# Altium PCB System Control.PcbDoc (part 1 of 7)
Units mil, origin at the board's own origin, x right, y up, seen from the top; angles counter-clockwise.
Board outline 5312.56 x 5103.22 mil, 12 copper layers (Top, GND 2, Signal 3, Signal 4, 3.3V 5, Signal 6, Signal 7, 2.5V 8, Signal 9, Signal 10, GND 11, Bottom); 503 components, 484 nets, 2219 pads, 1158 vias.
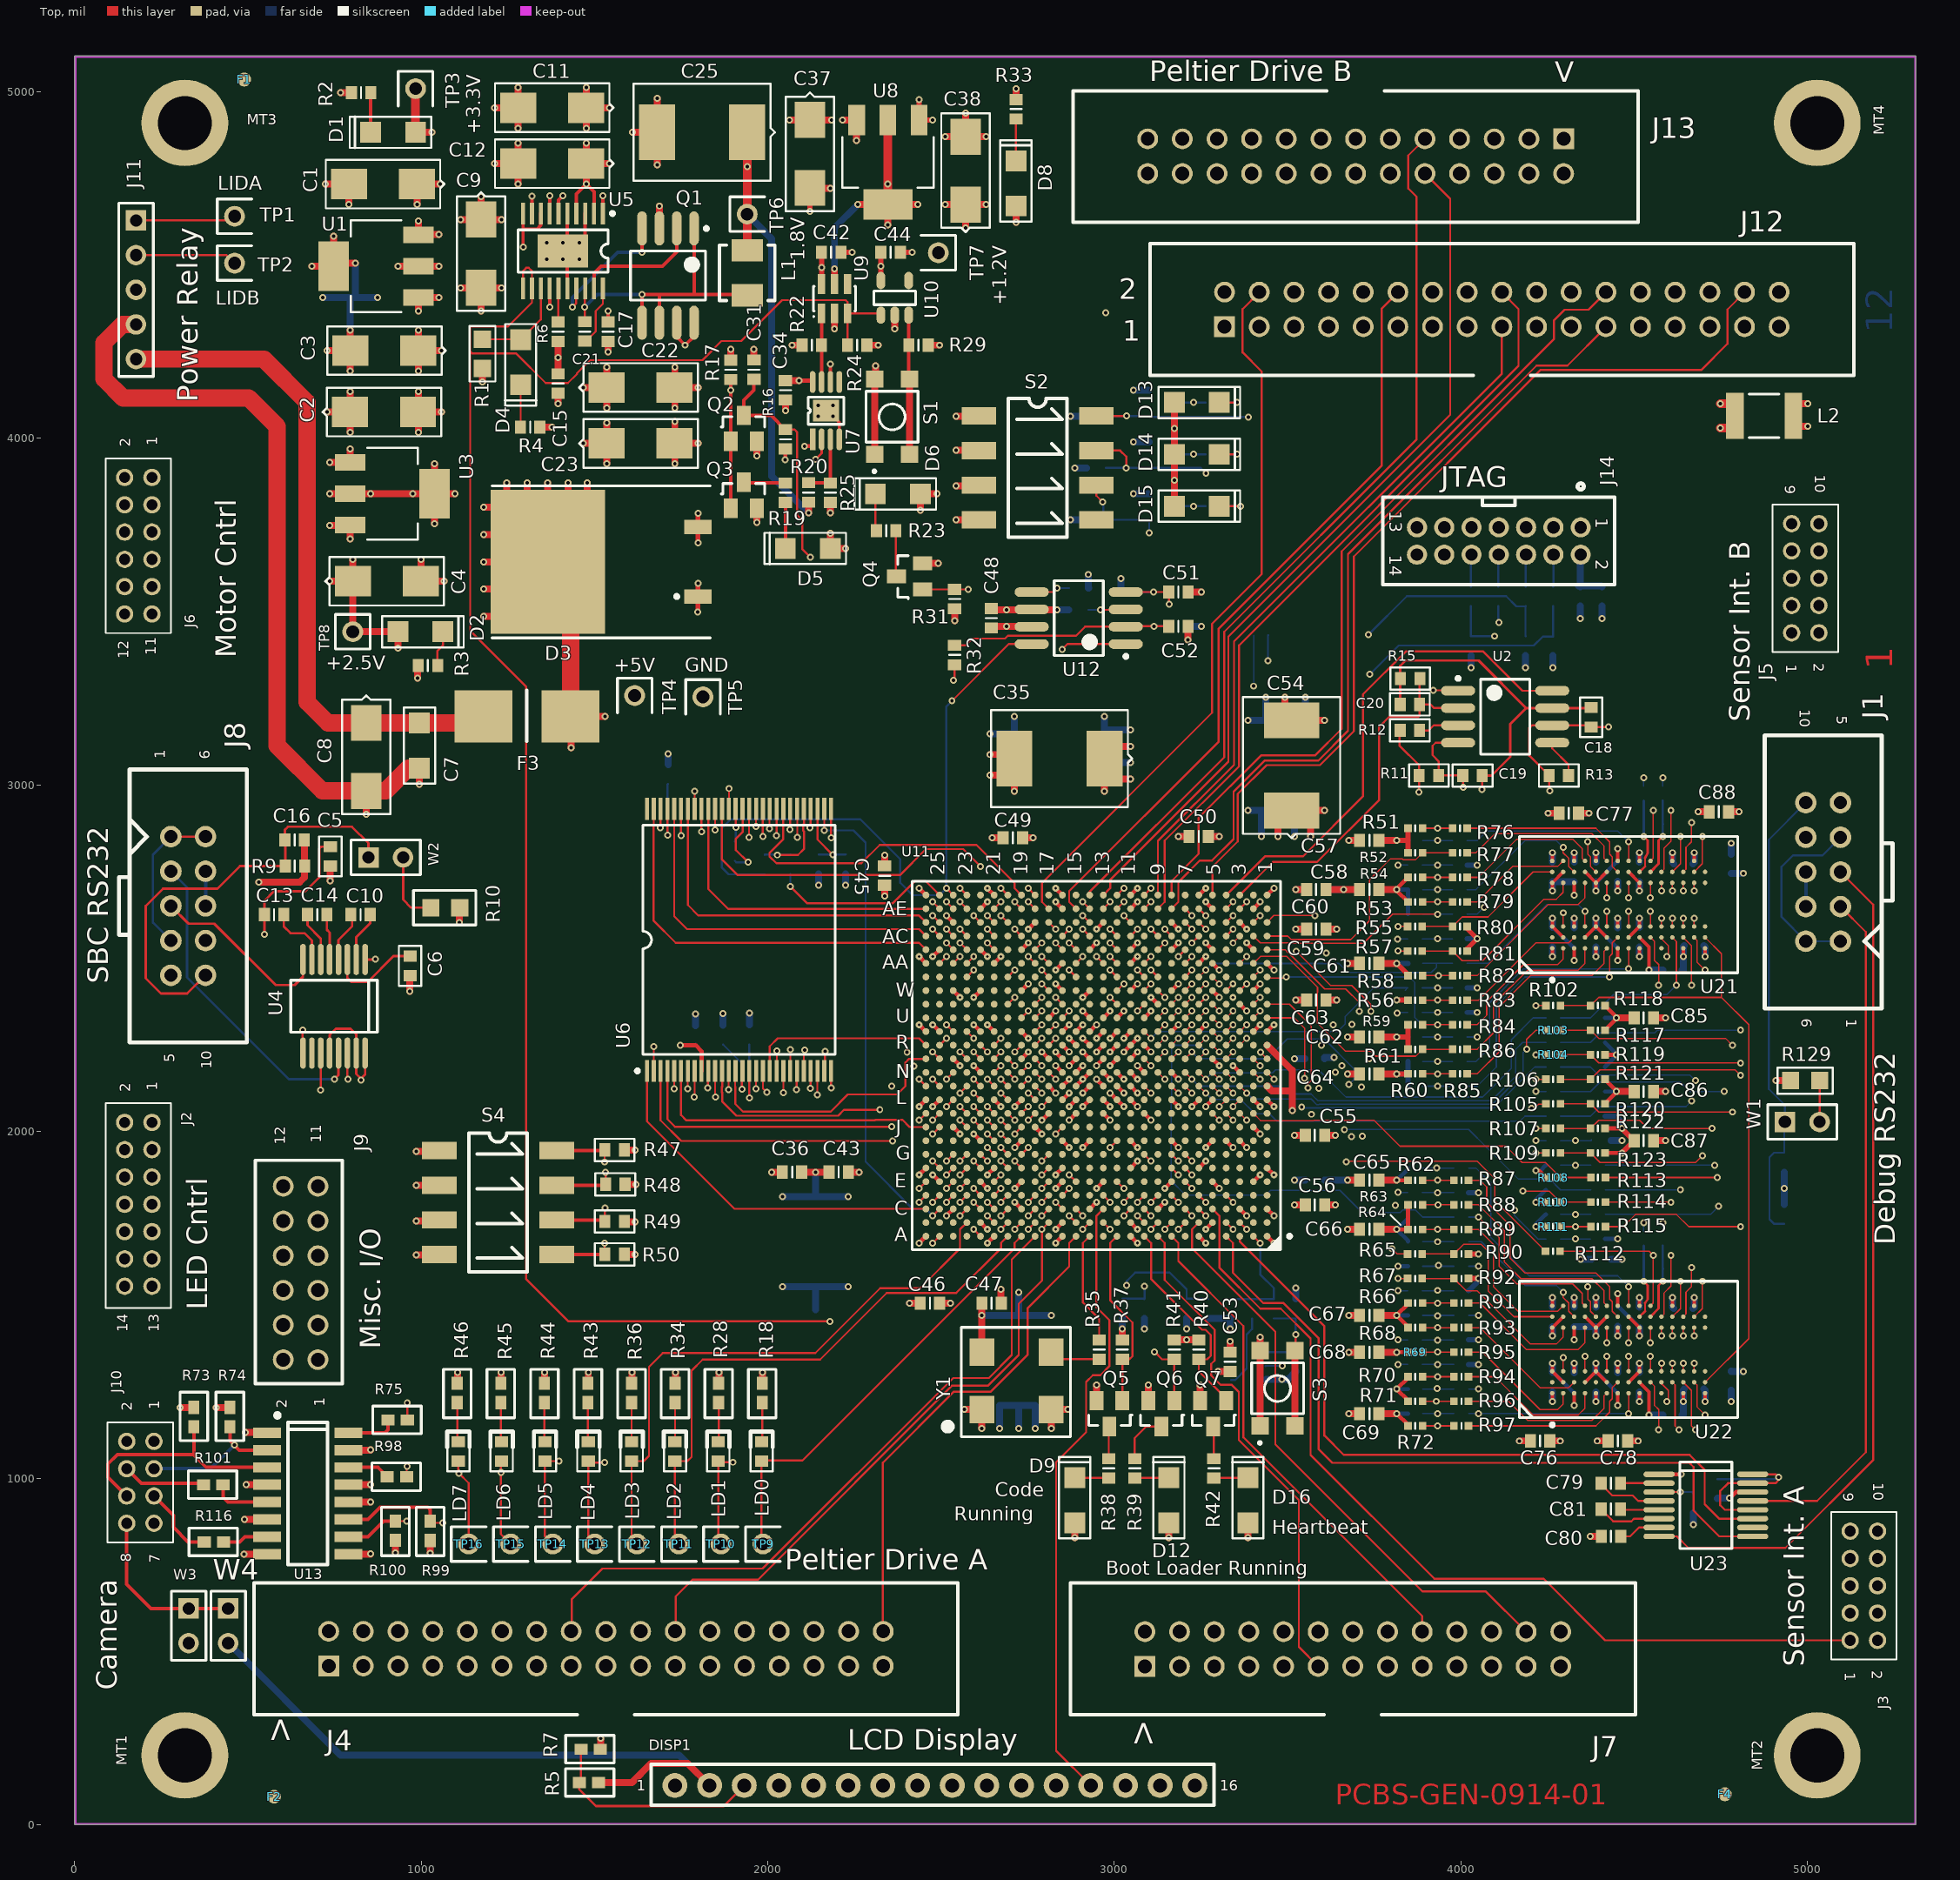
[diagram p0: Top view]
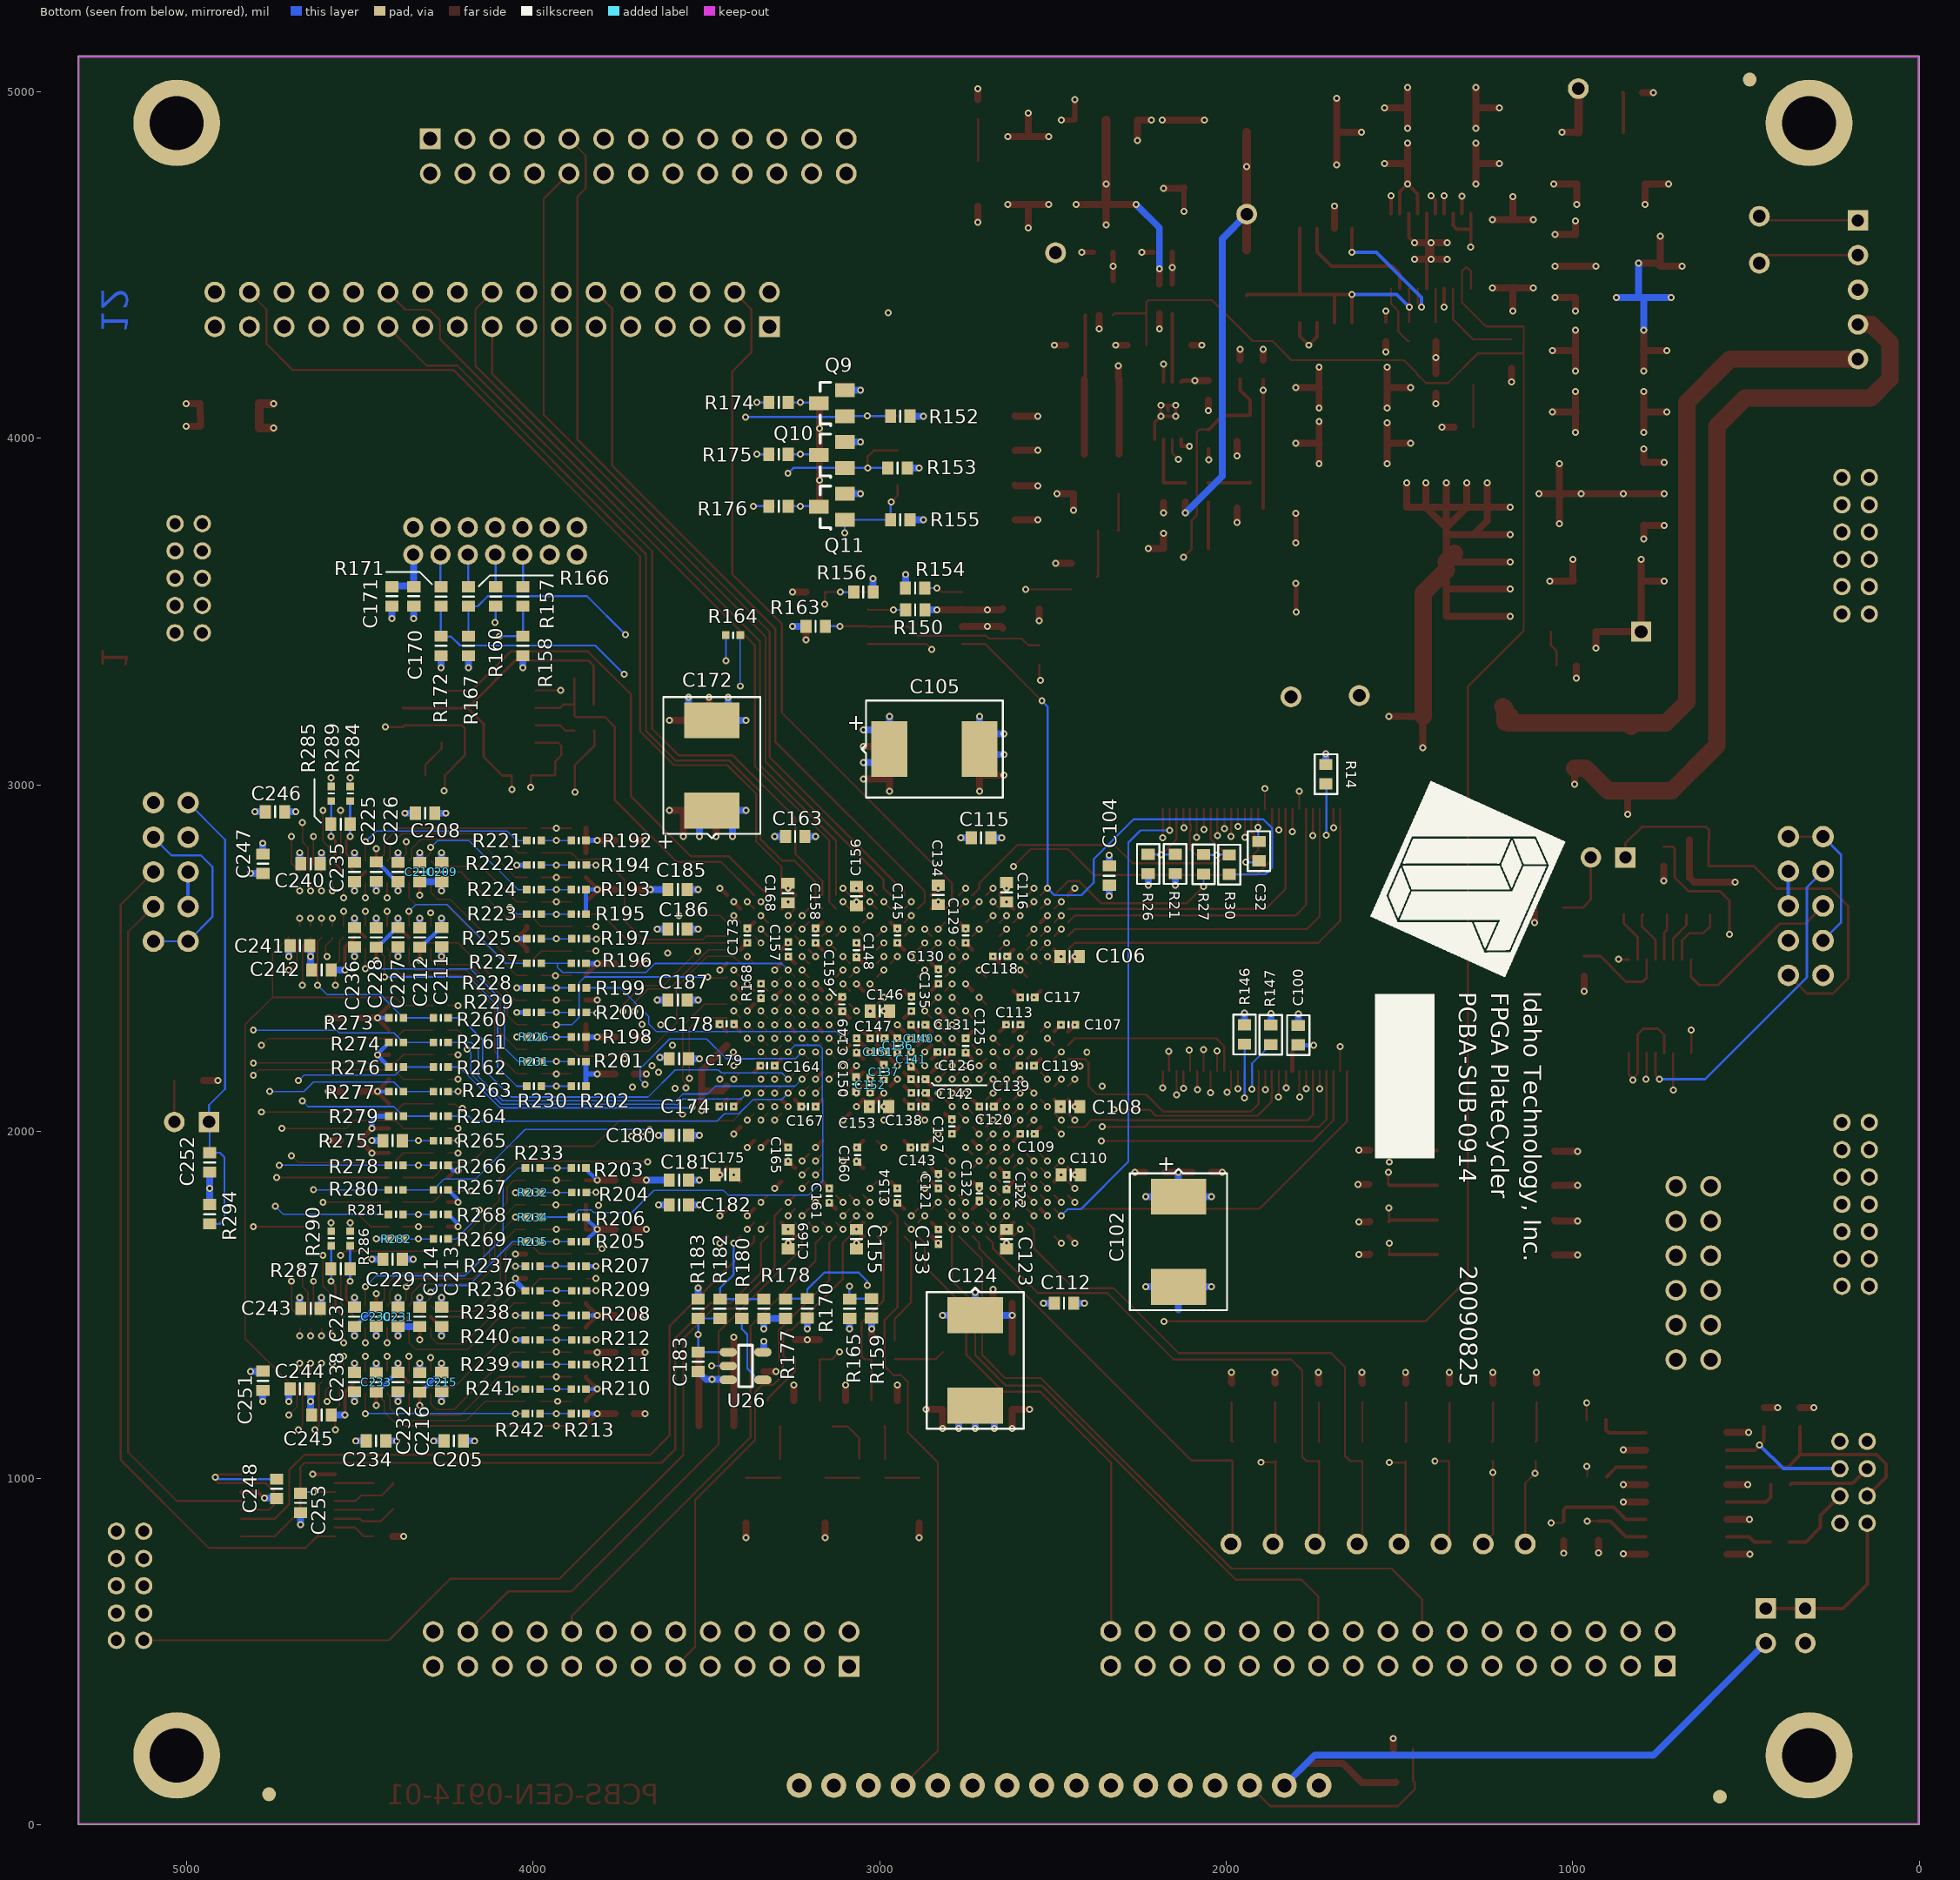
[diagram p1: Bottom view, seen from below]
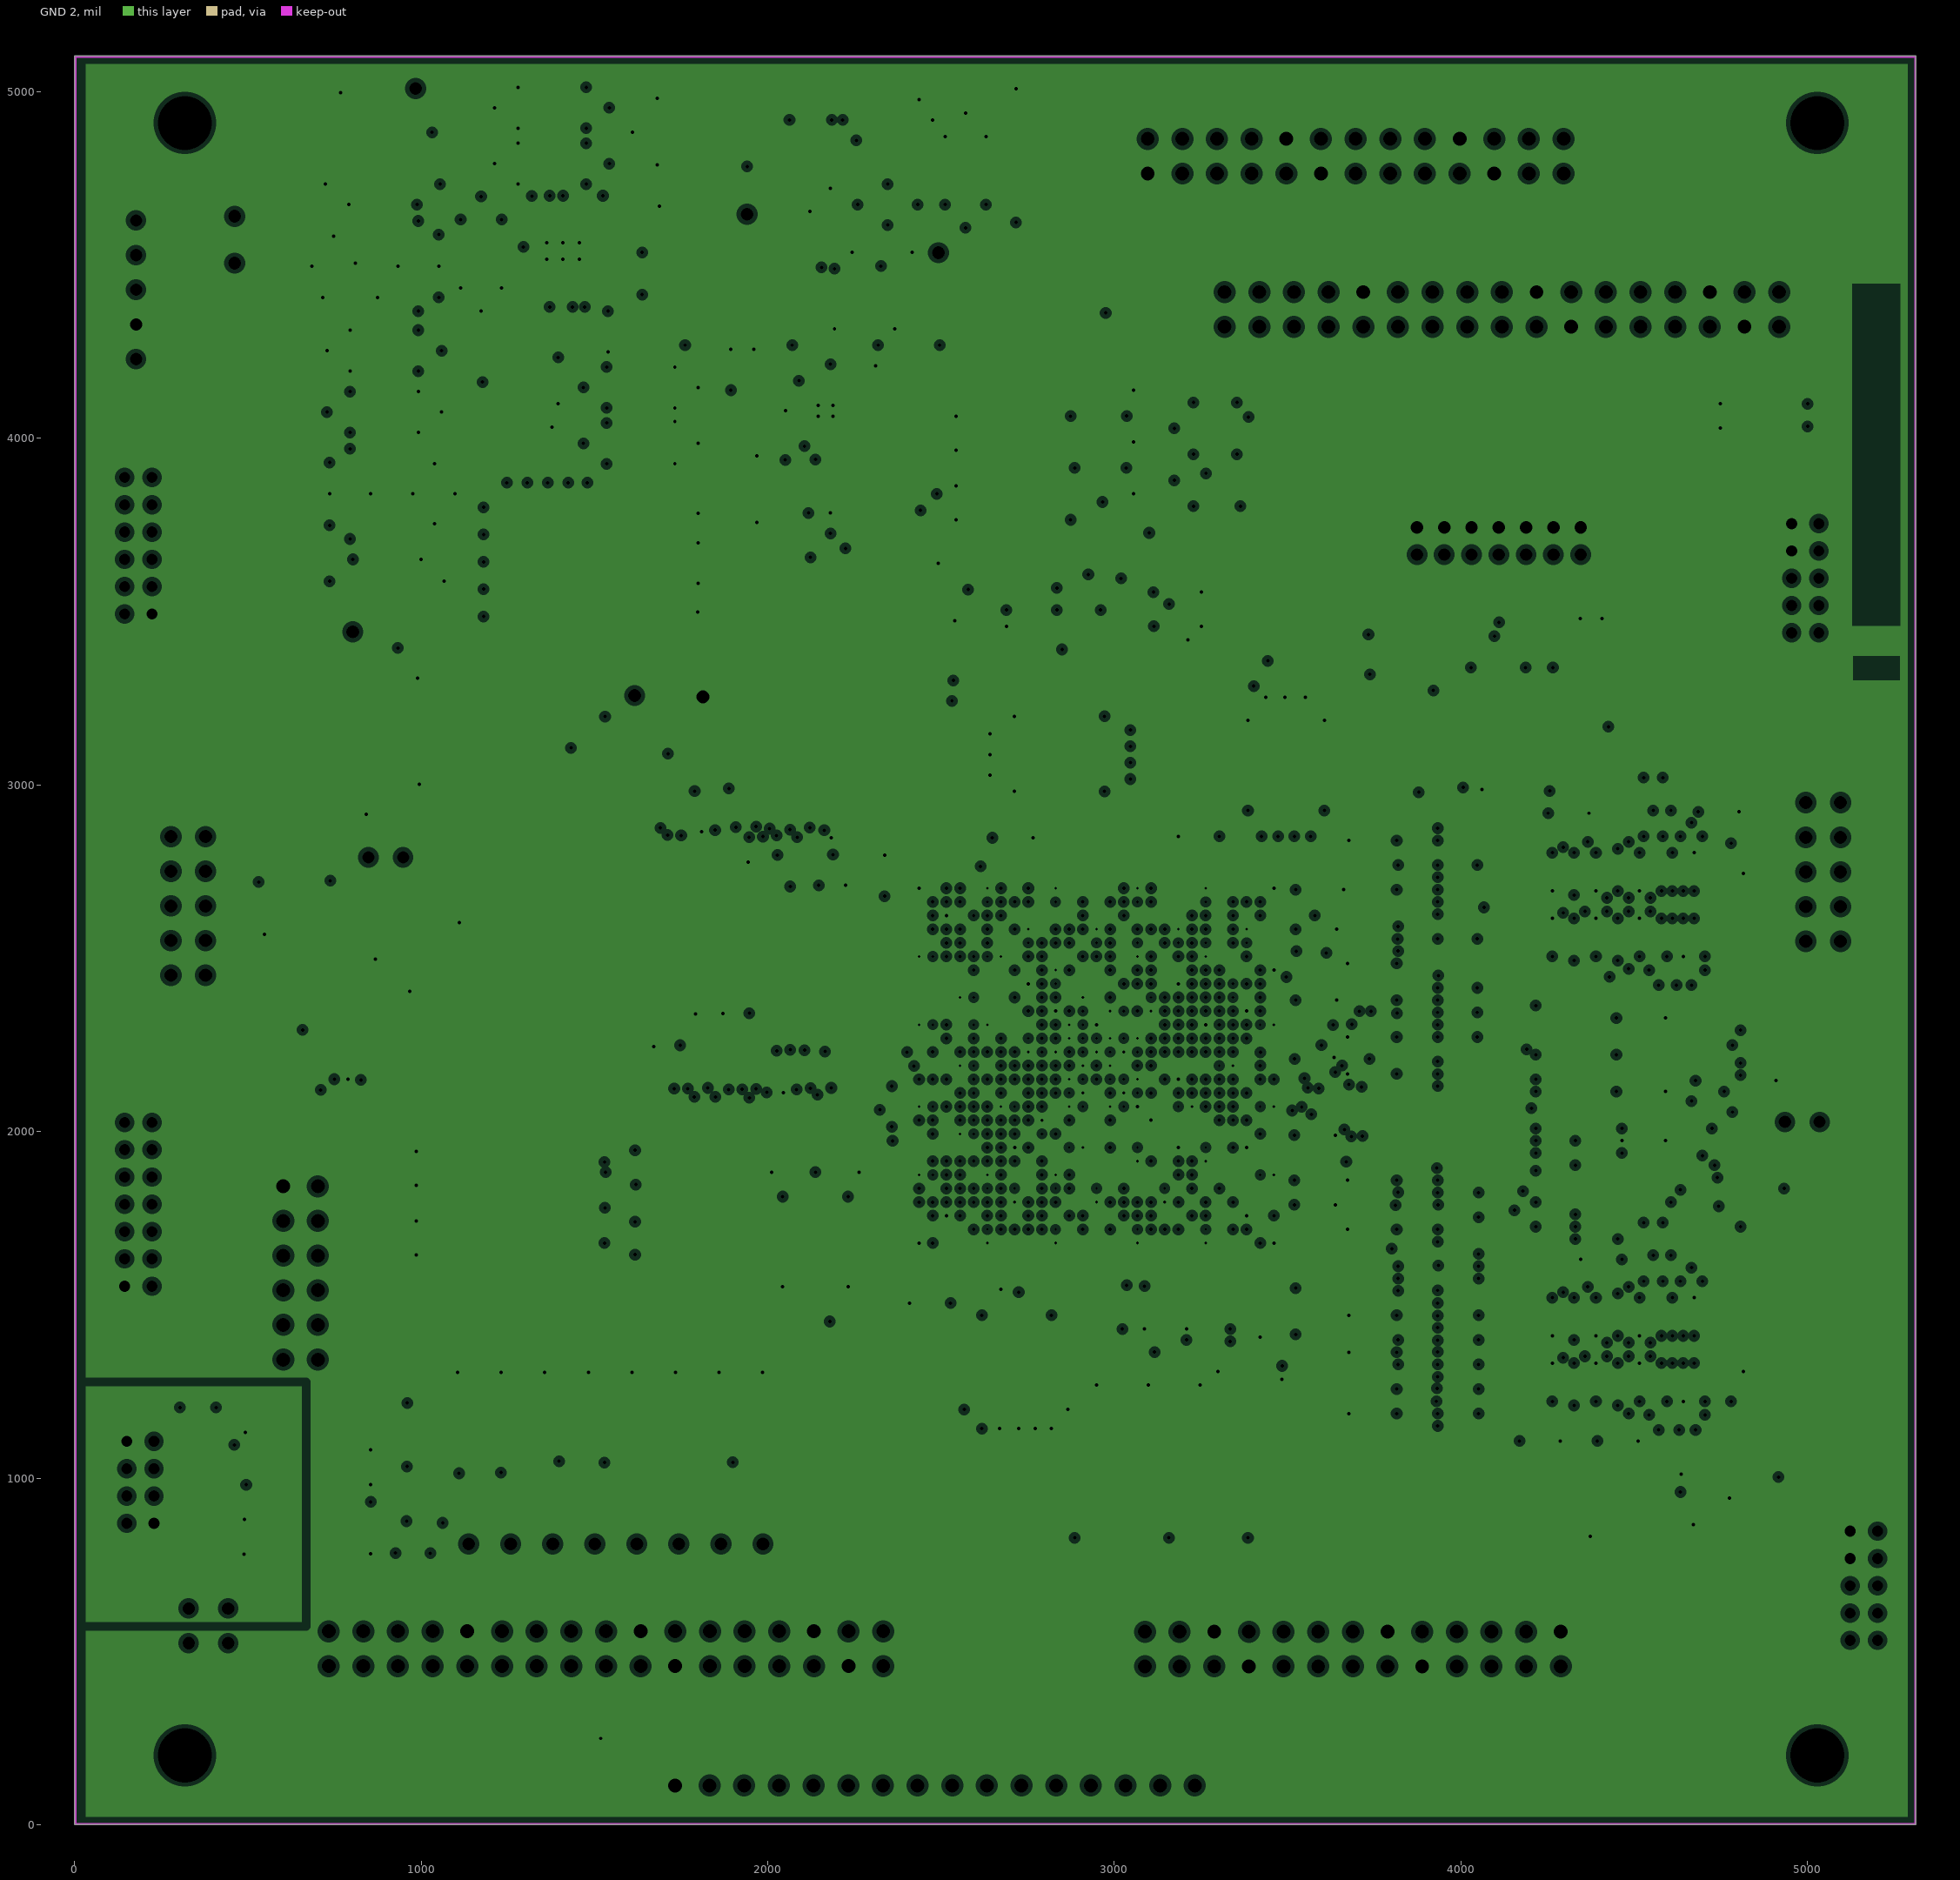
[diagram p2: GND 2, clearances drawn from the general rule]
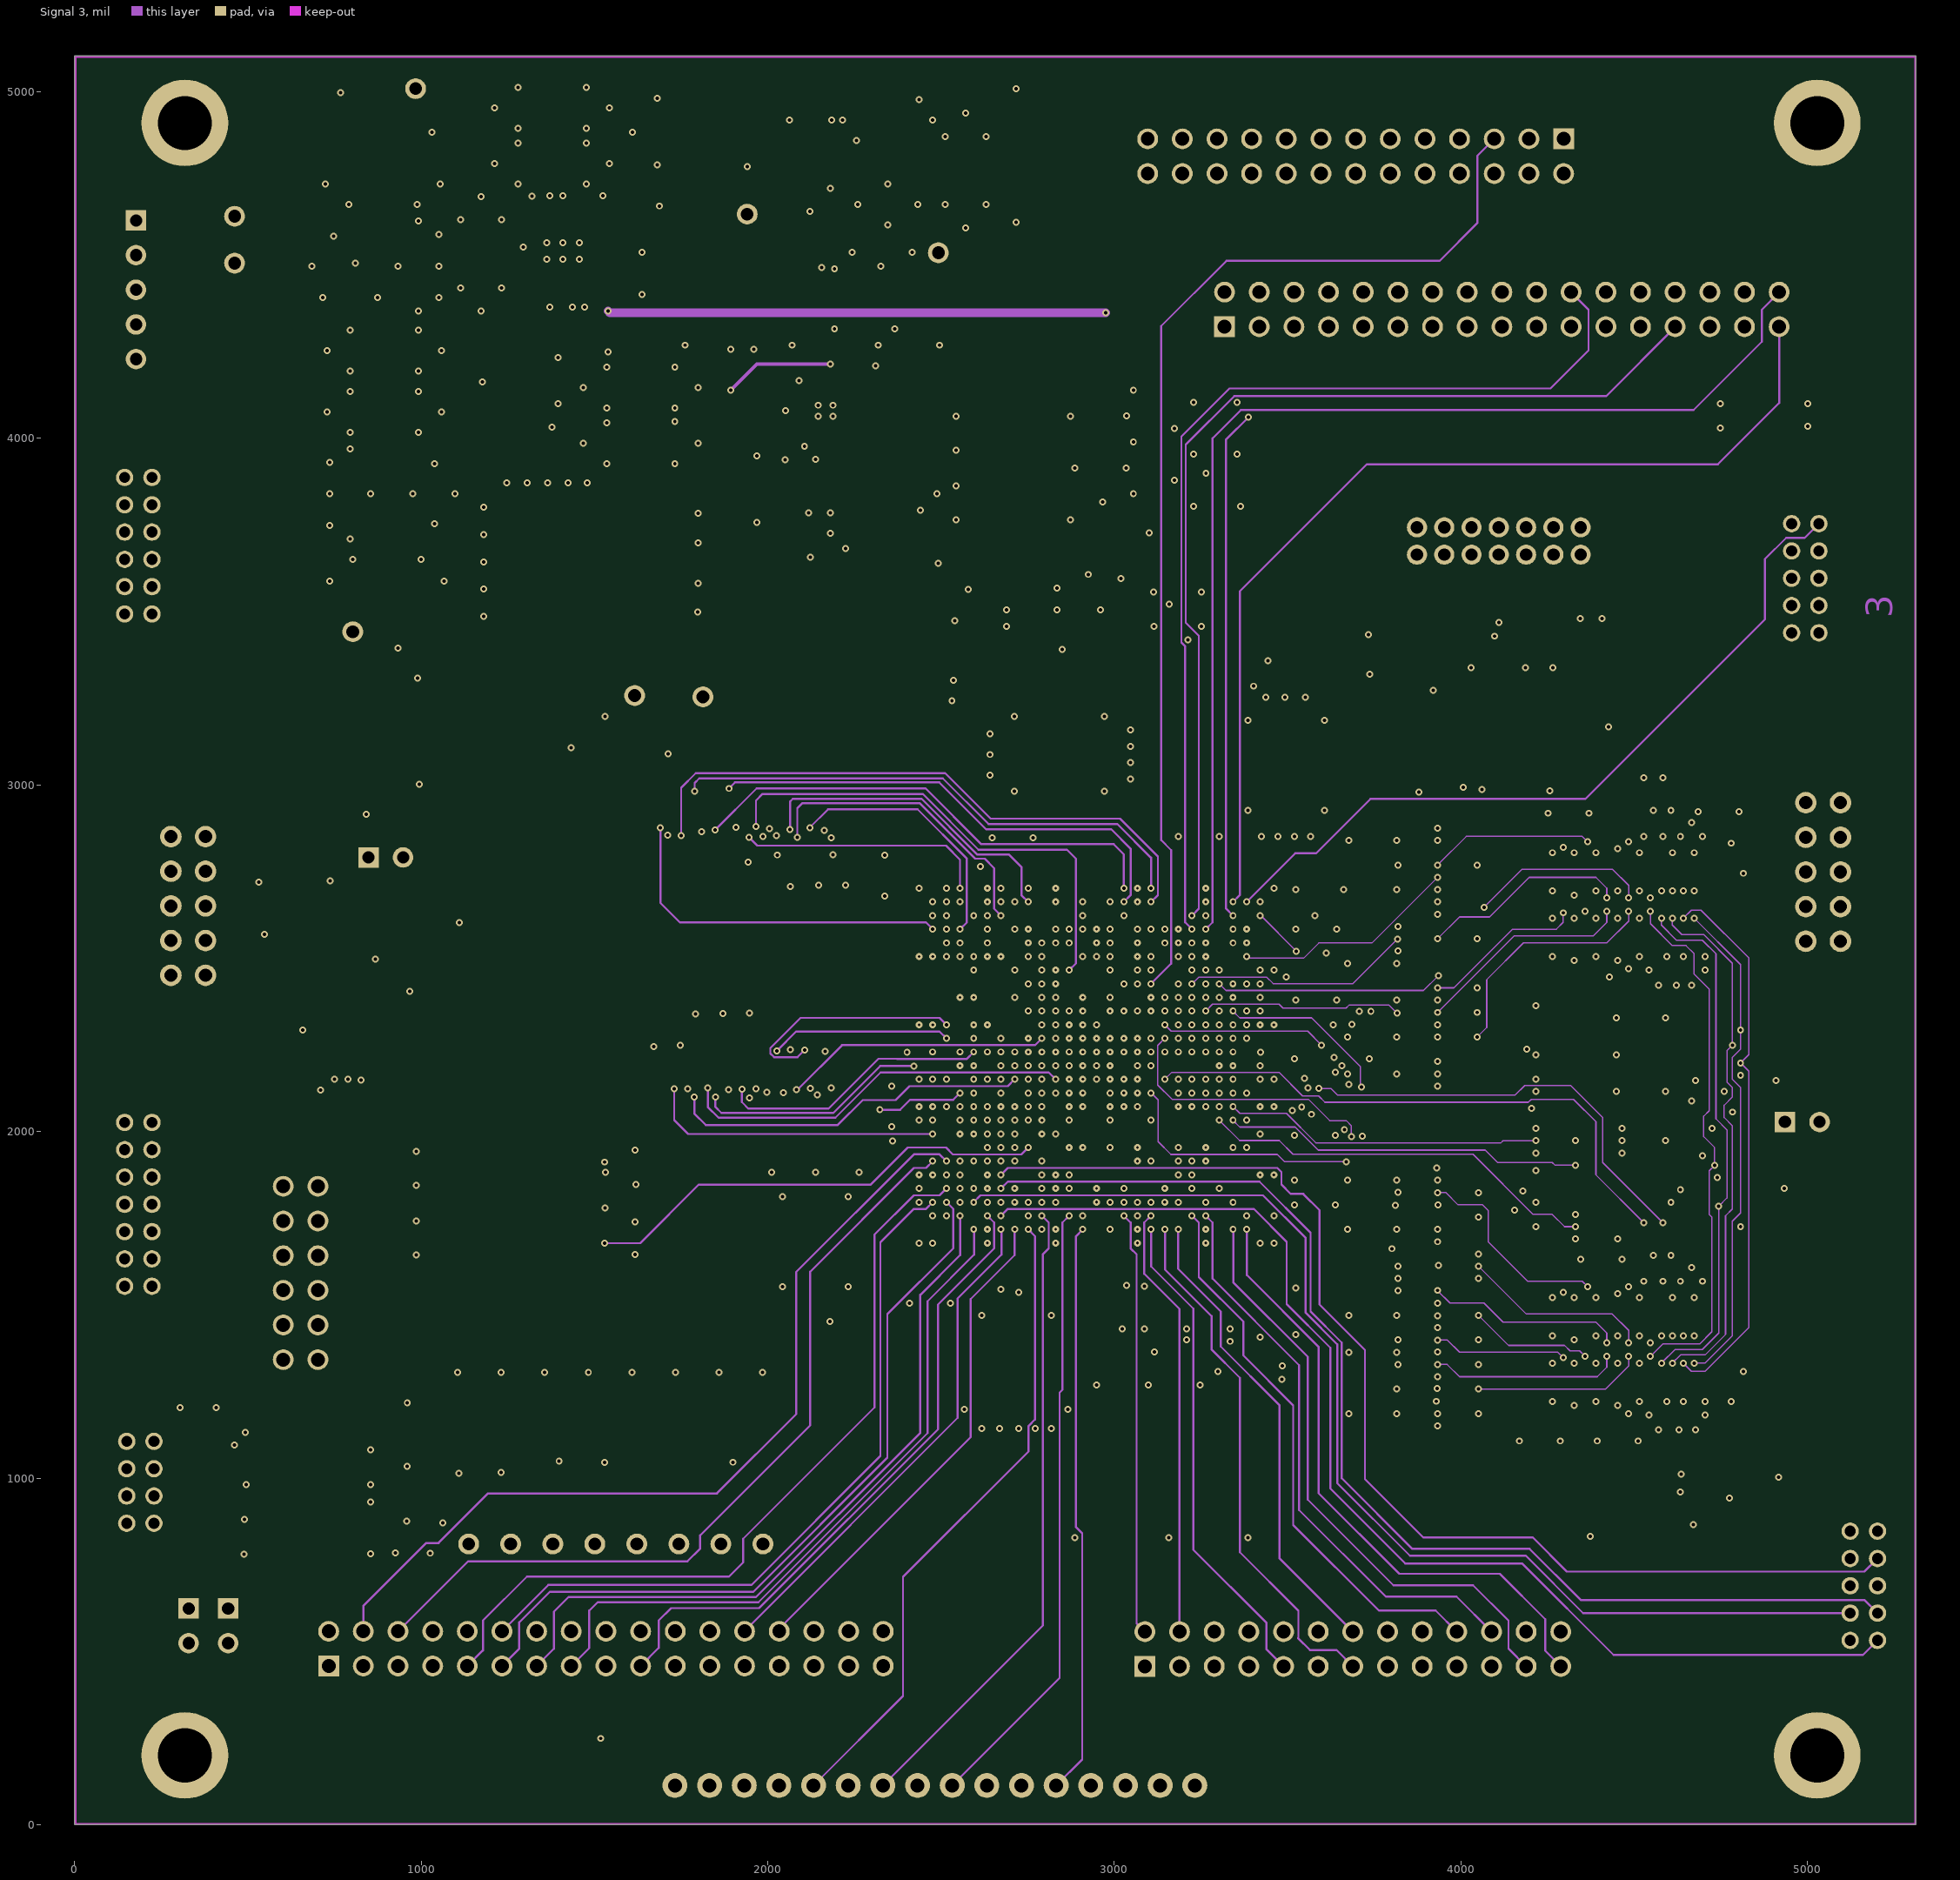
[diagram p3: Signal 3]
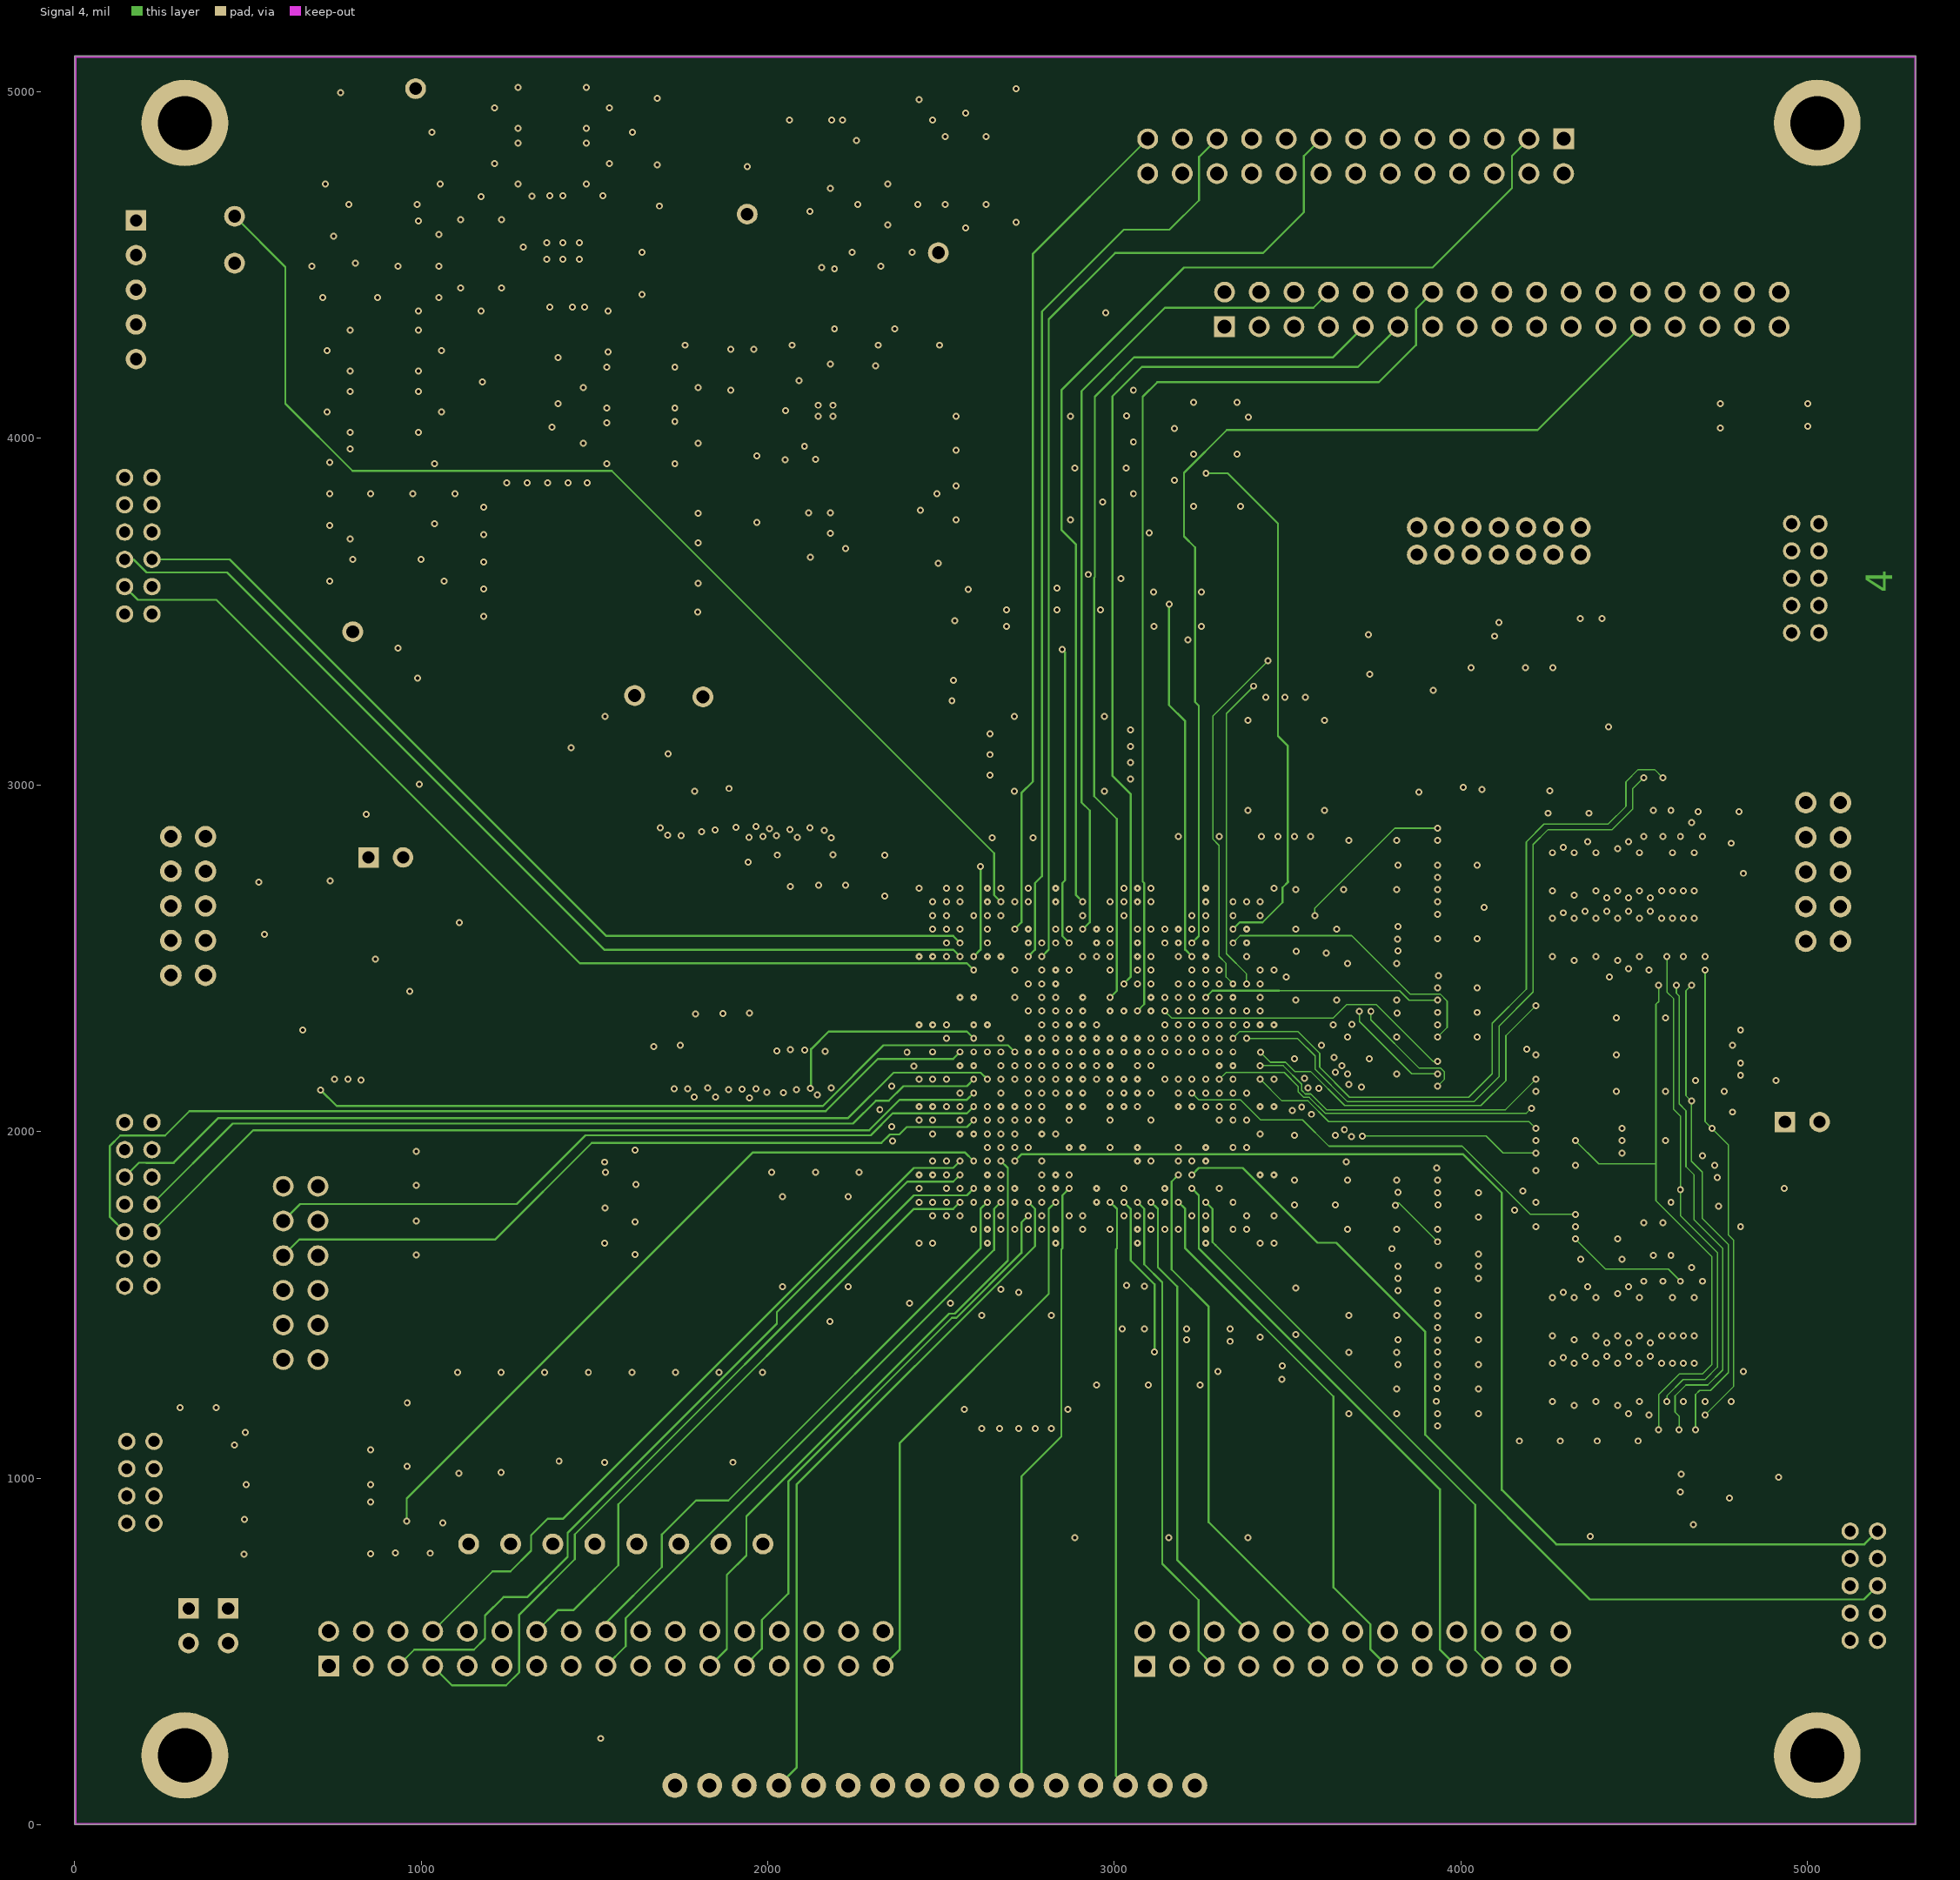
[diagram p4: Signal 4]
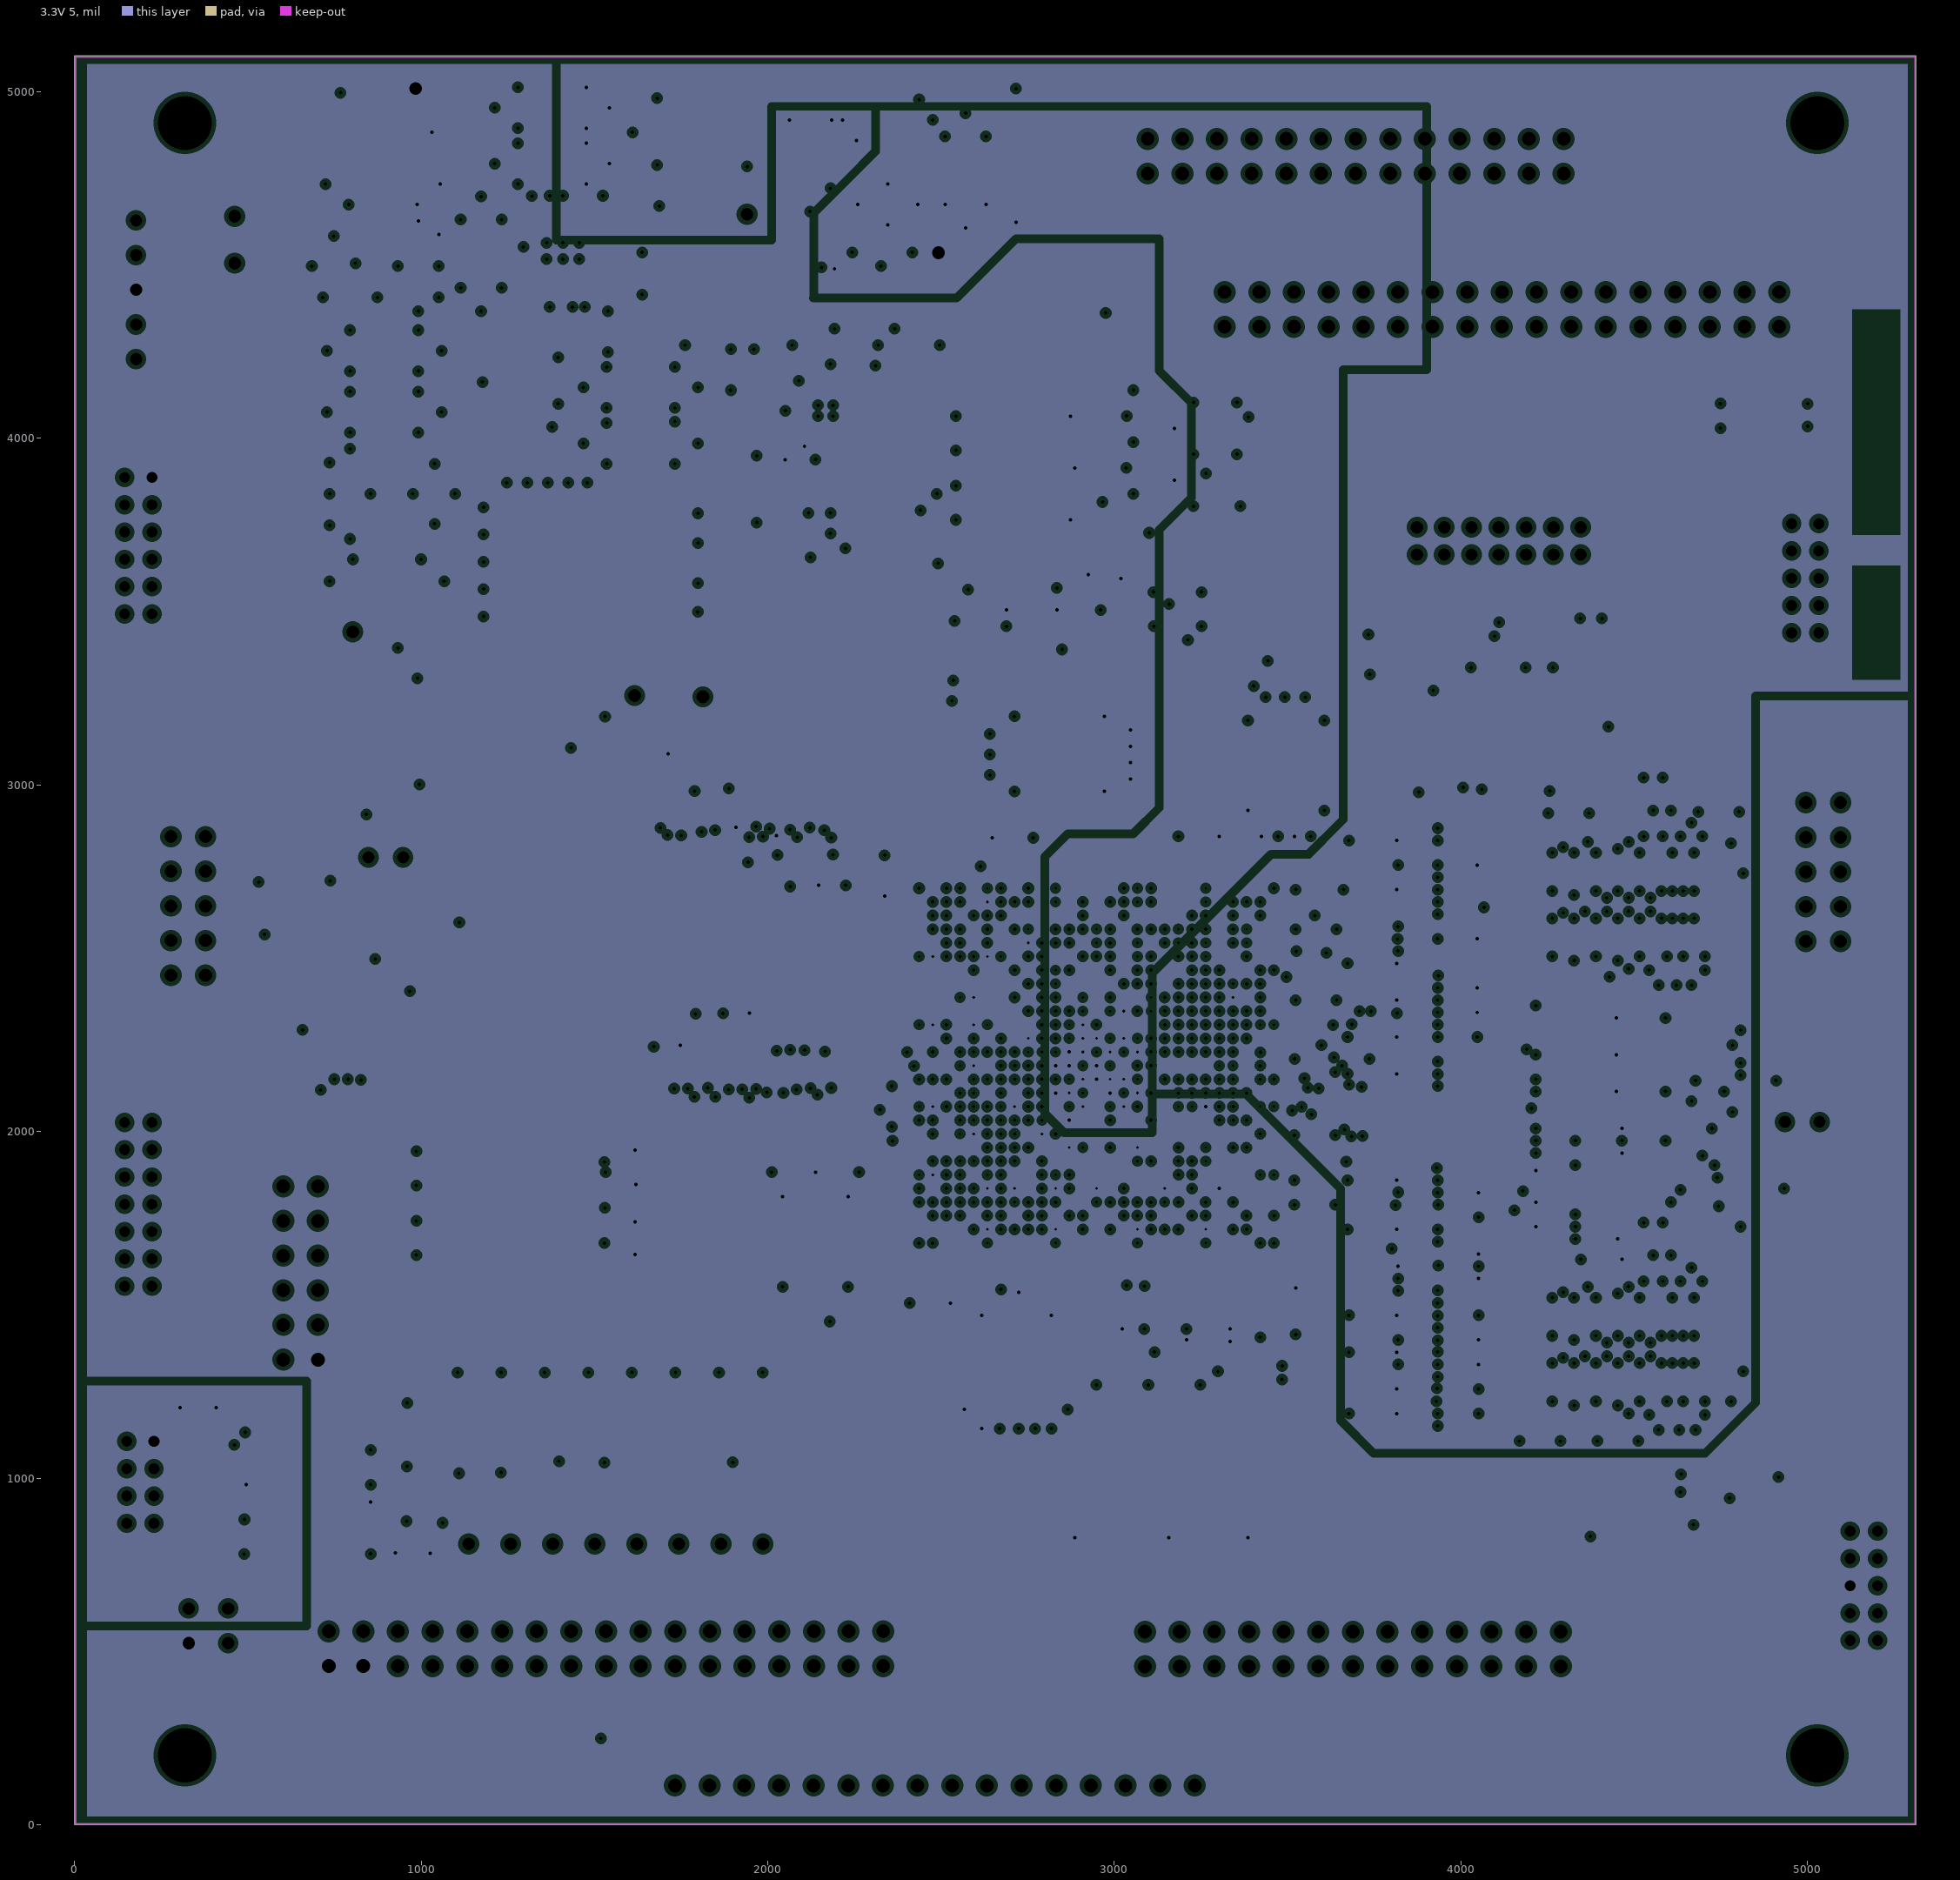
[diagram p5: 3.3V 5, clearances drawn from the general rule]
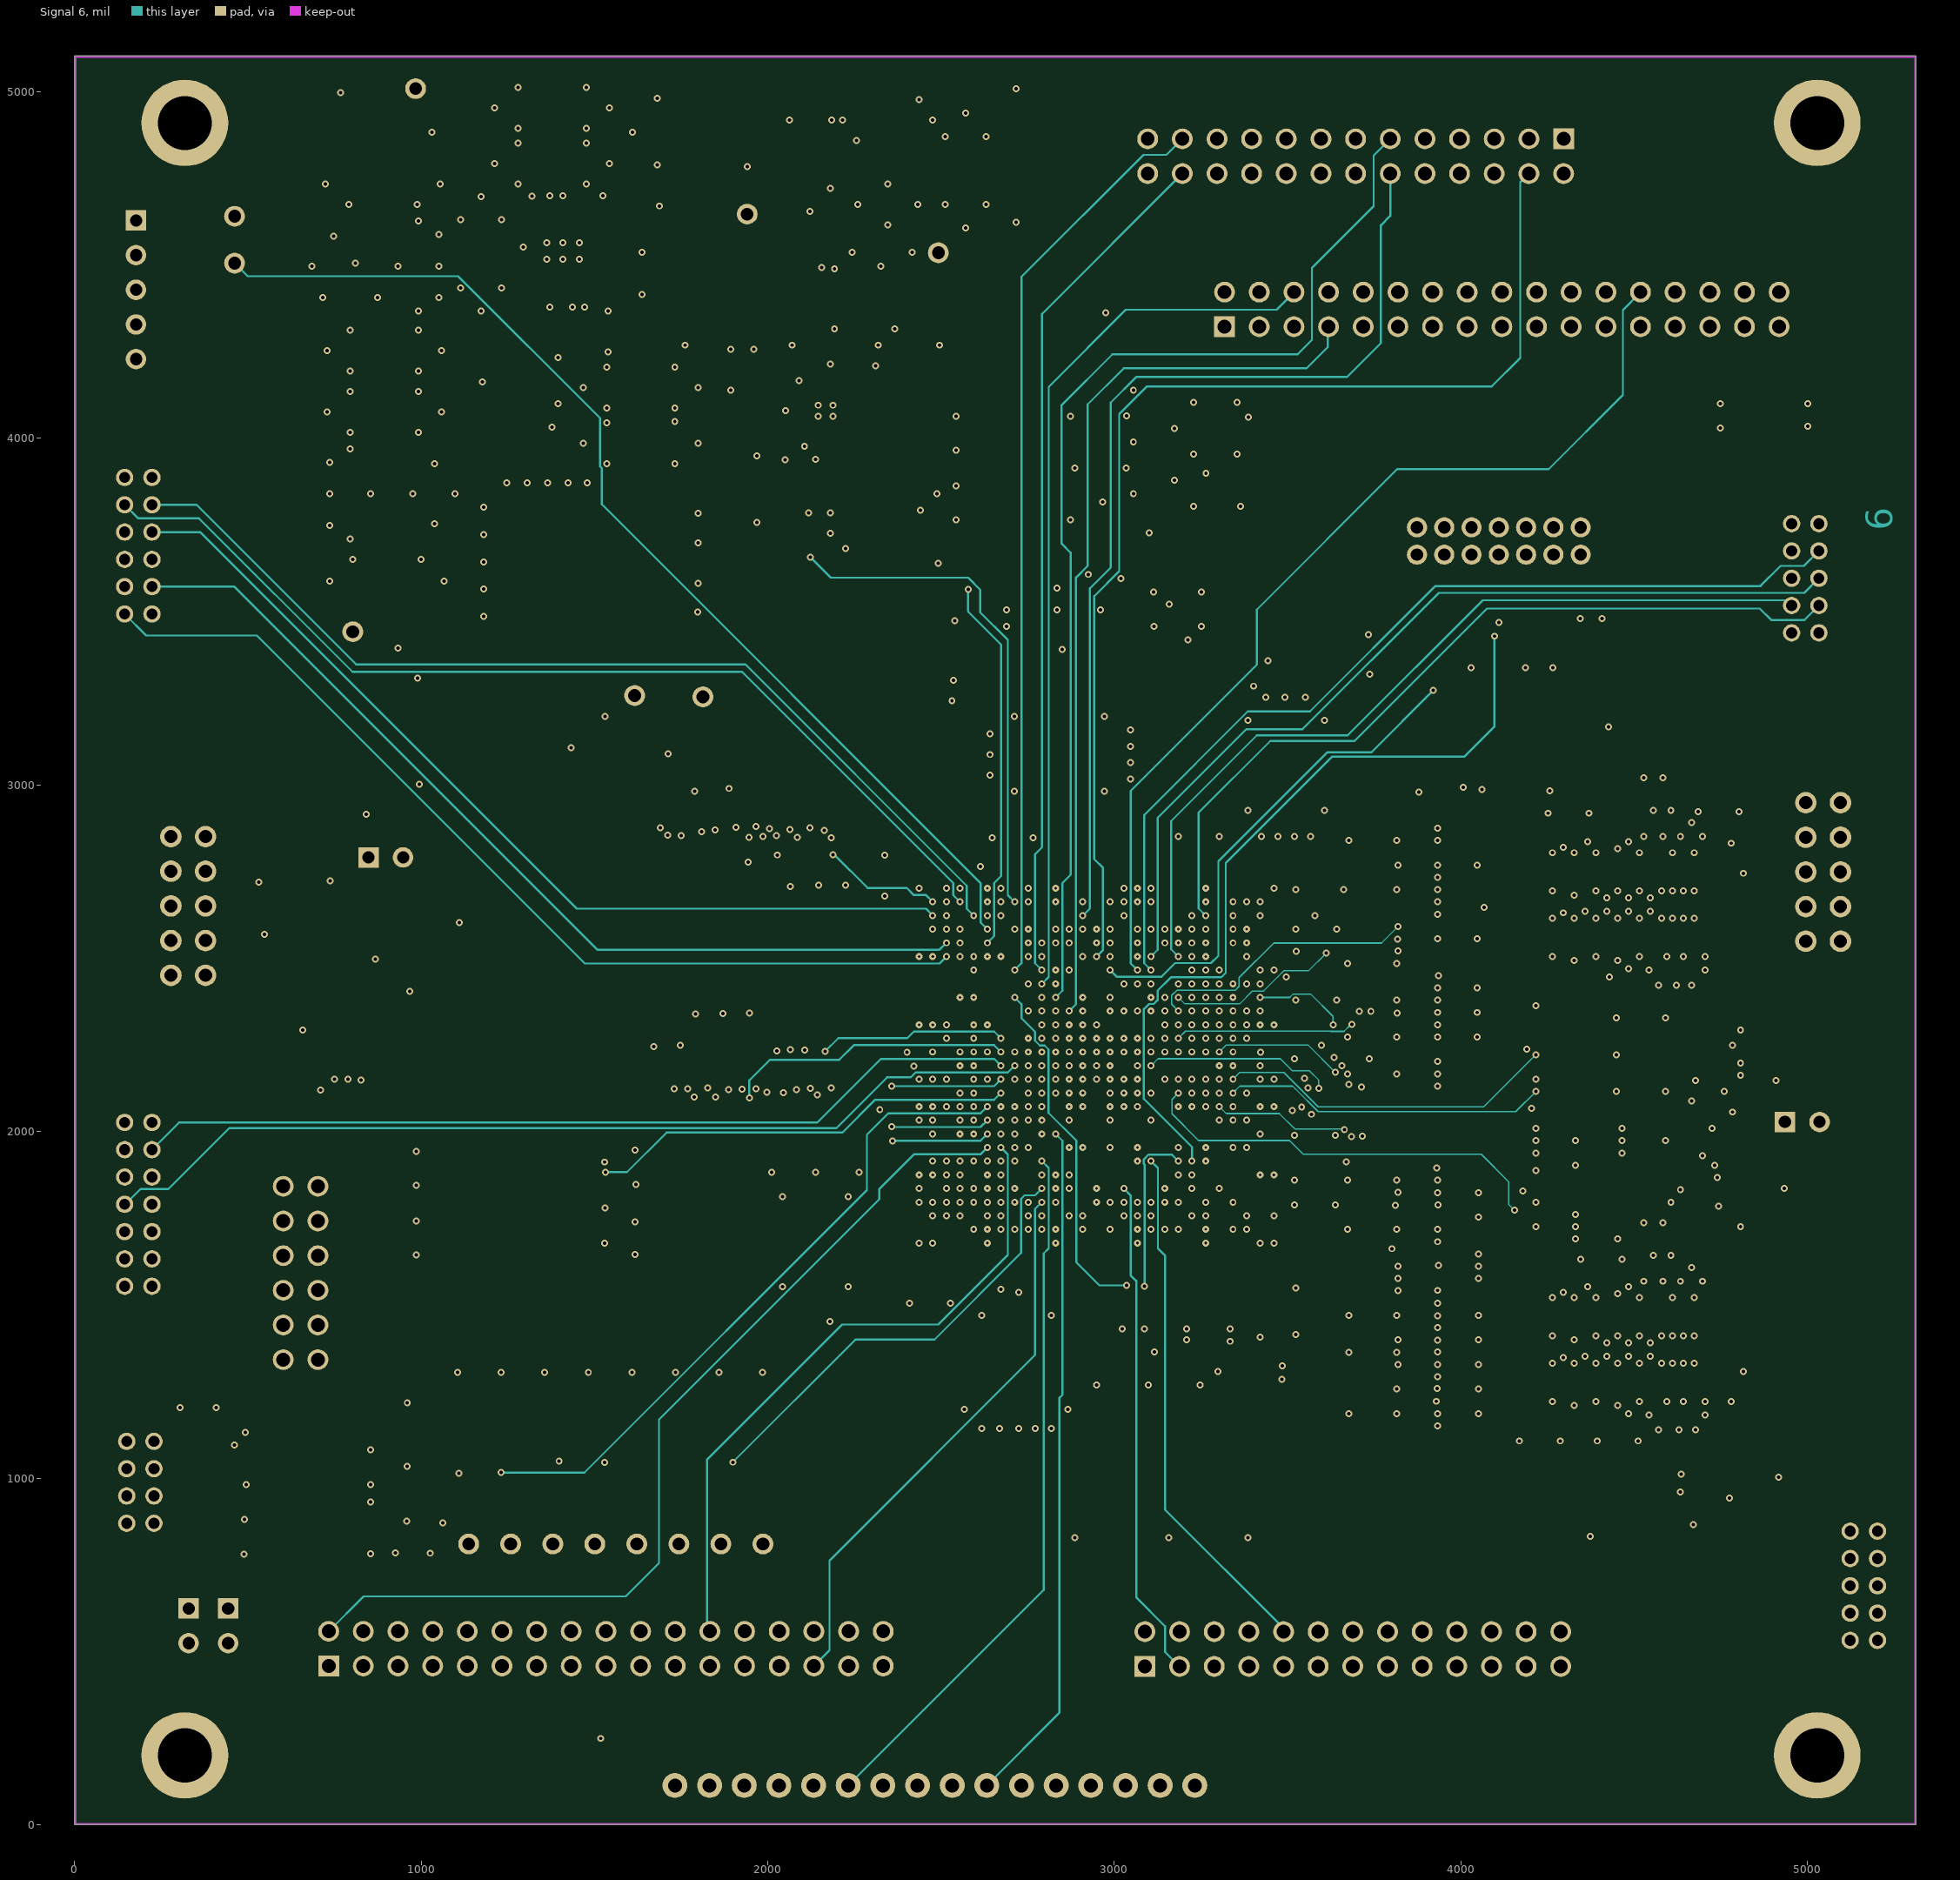
[diagram p6: Signal 6]
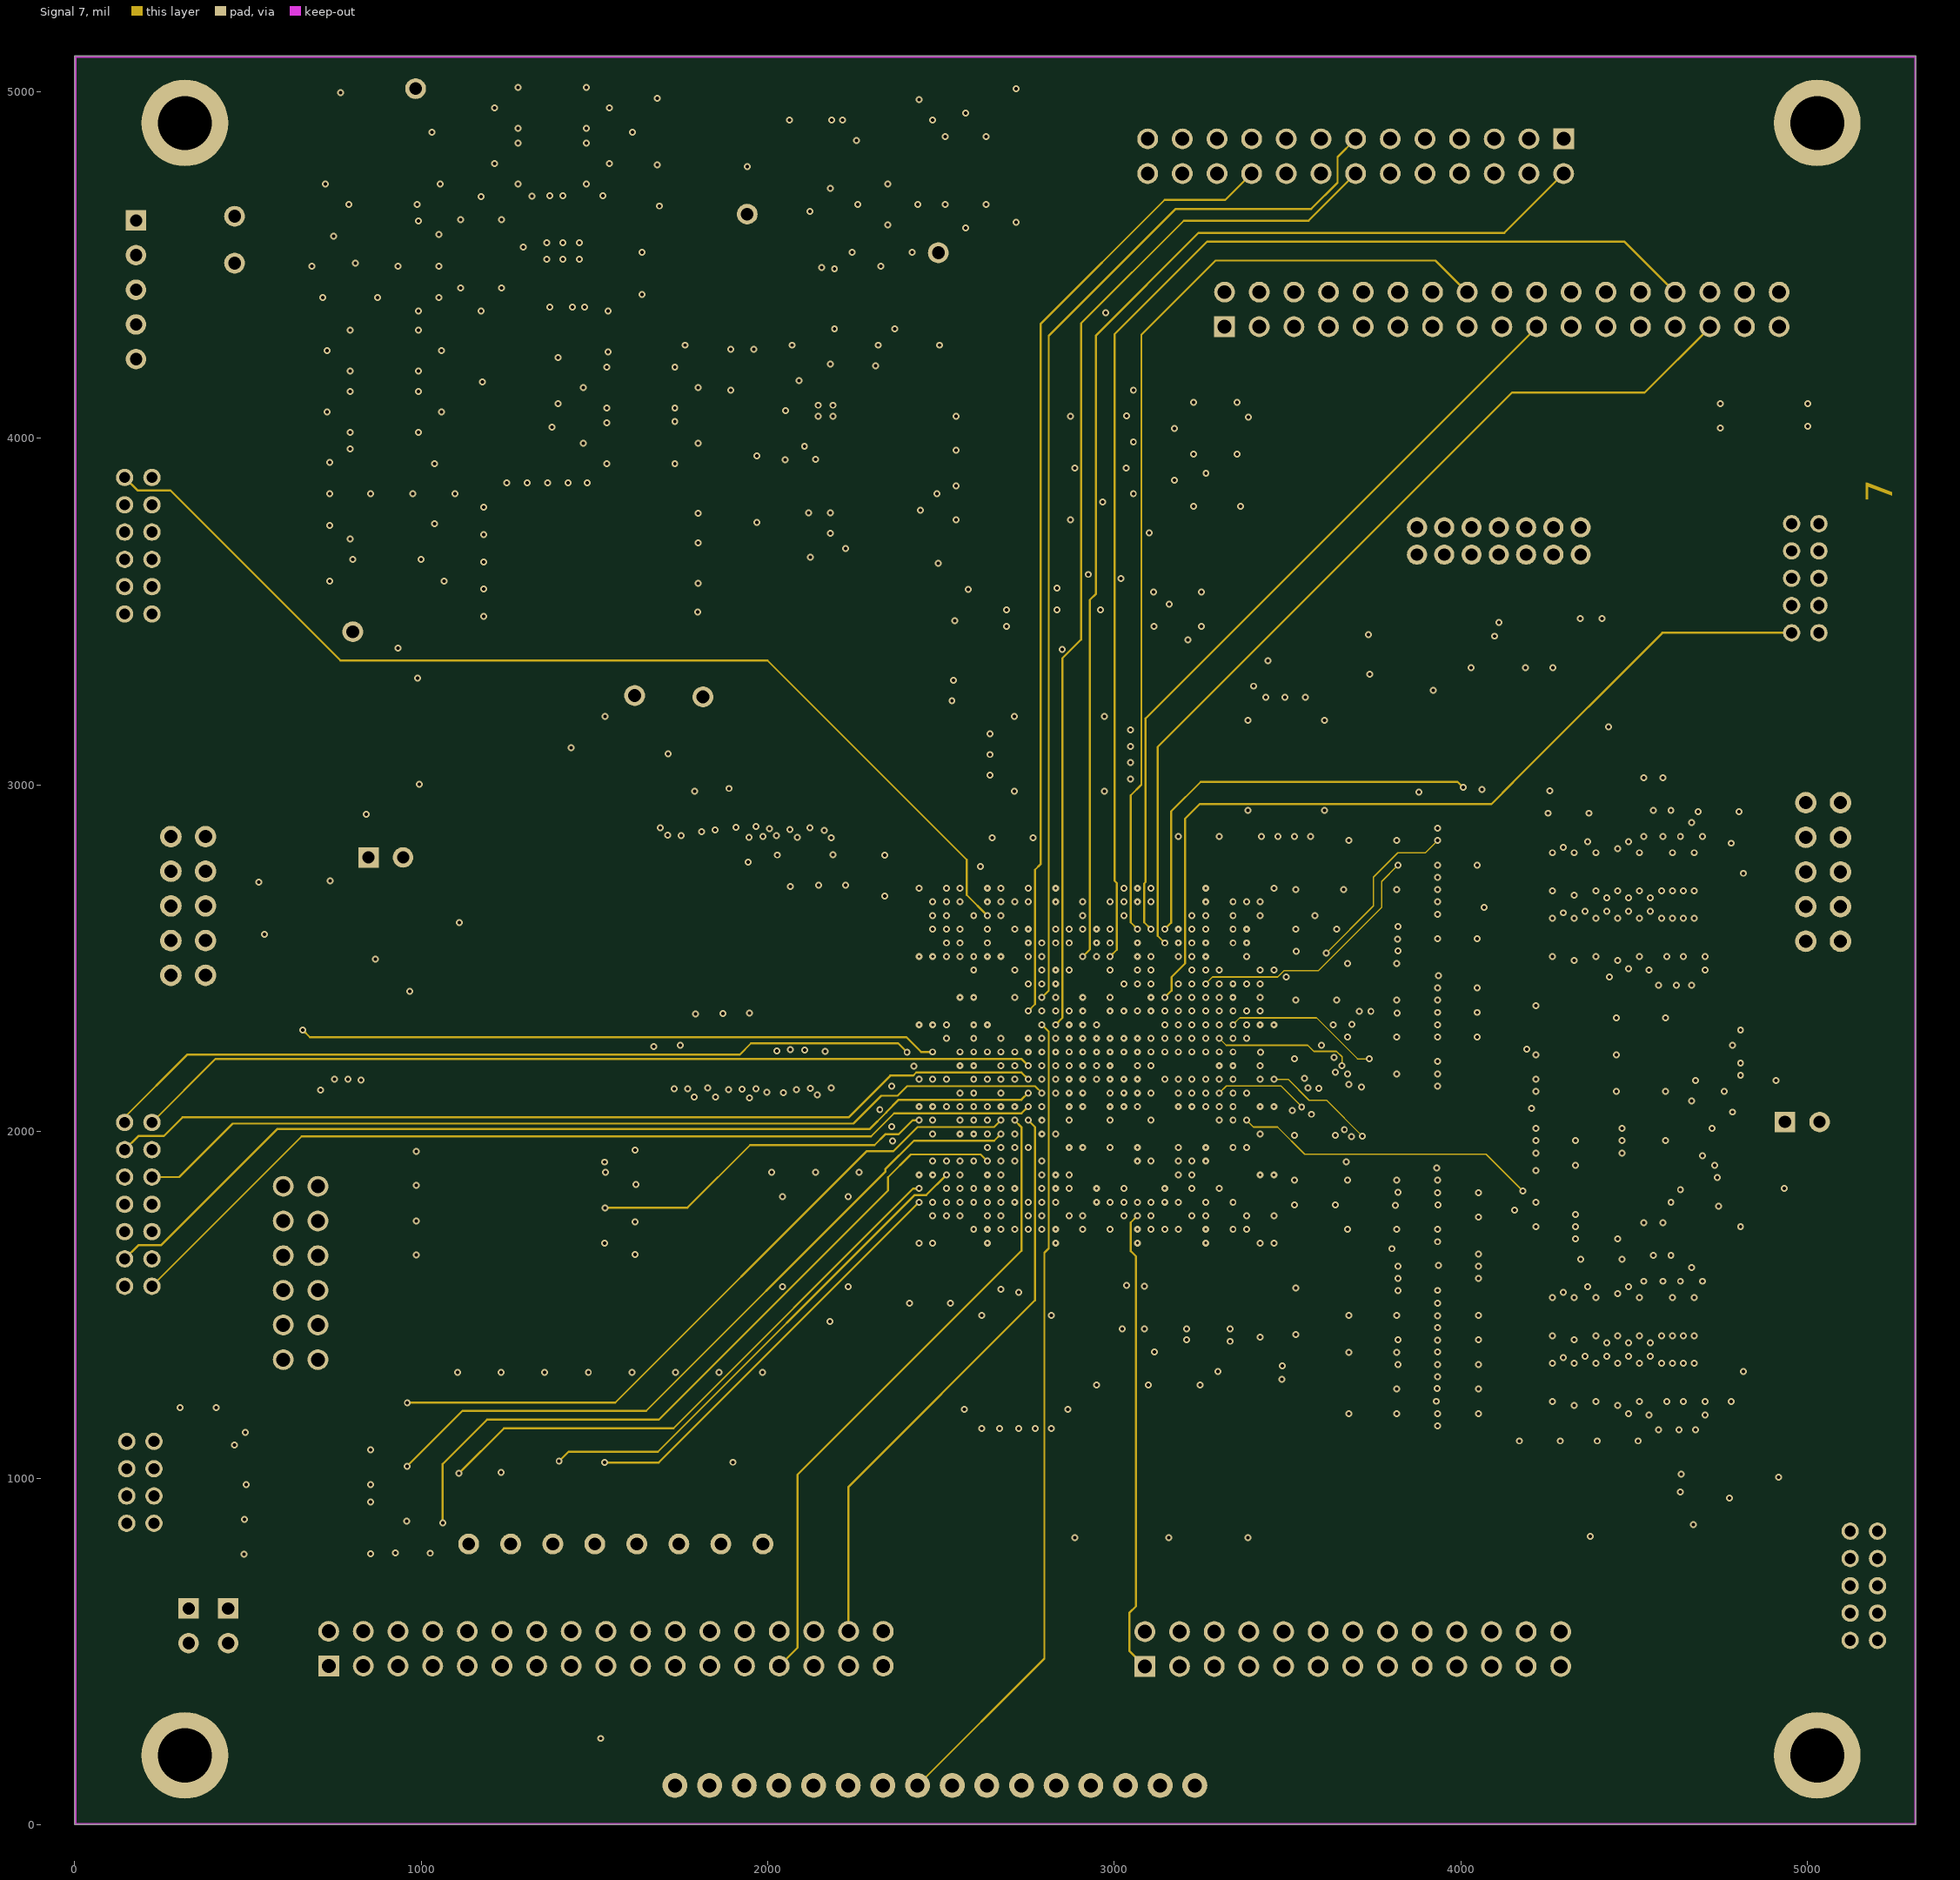
[diagram p7: Signal 7]
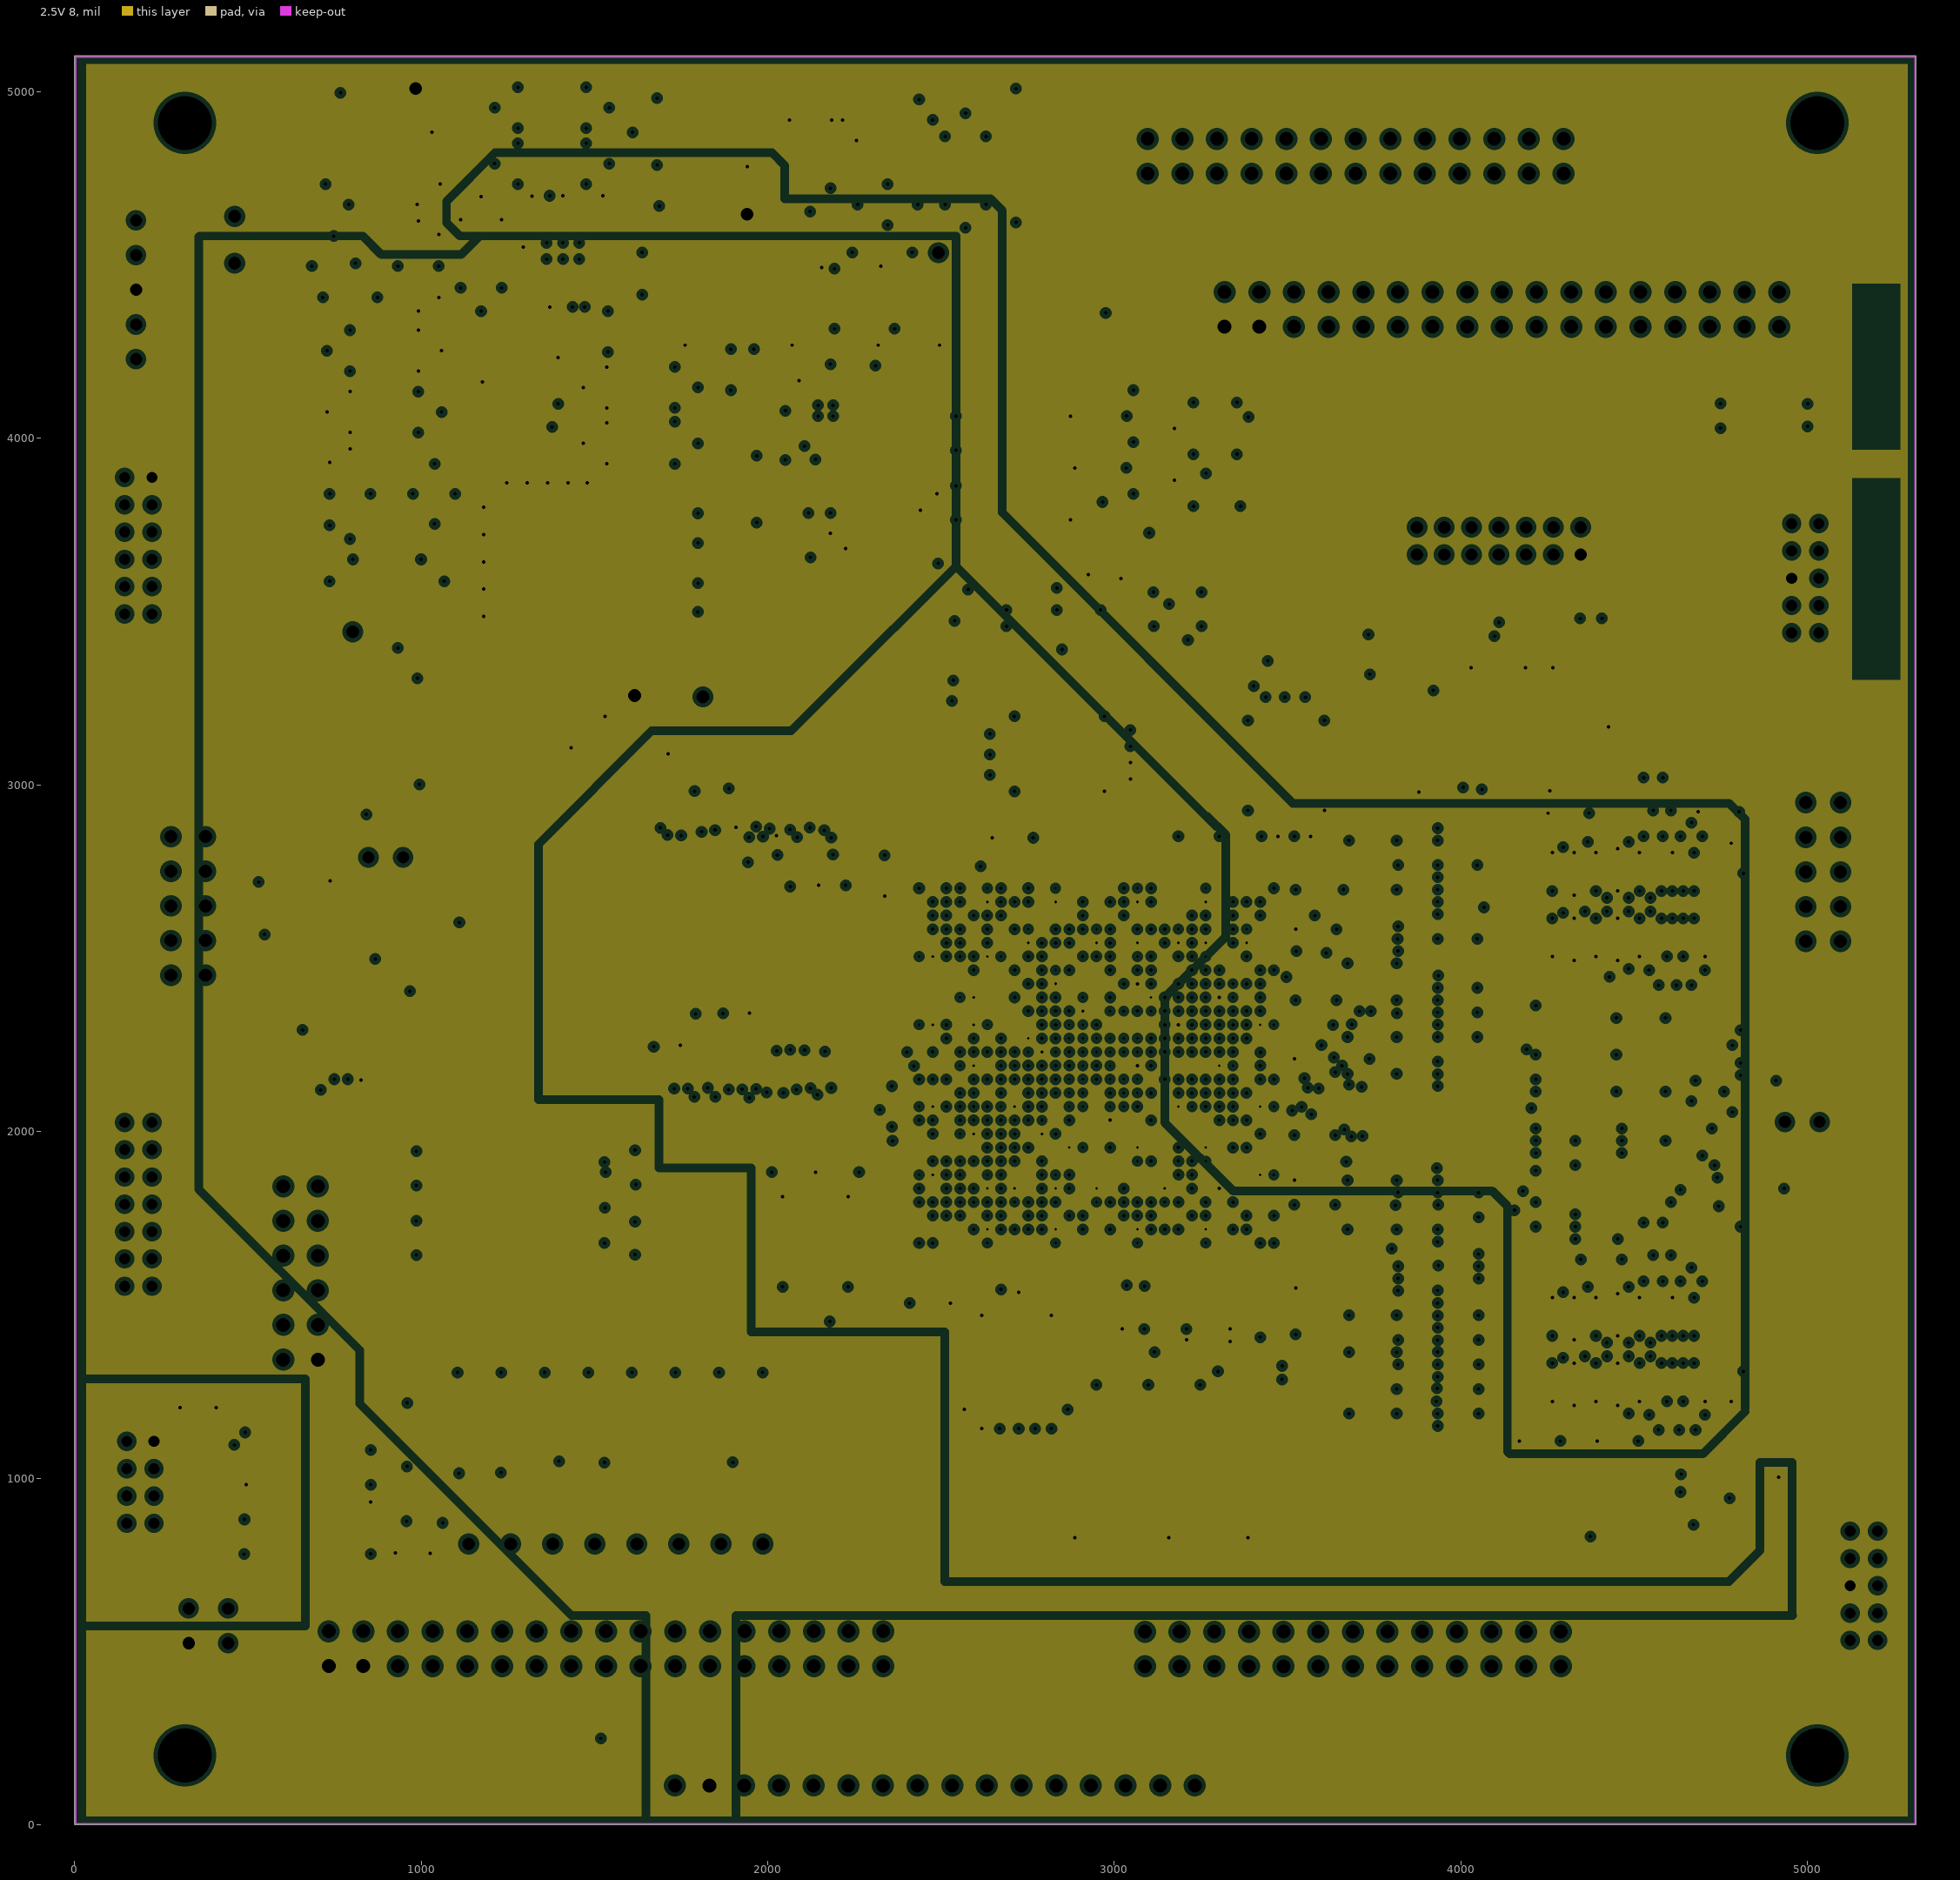
[diagram p8: 2.5V 8, clearances drawn from the general rule]
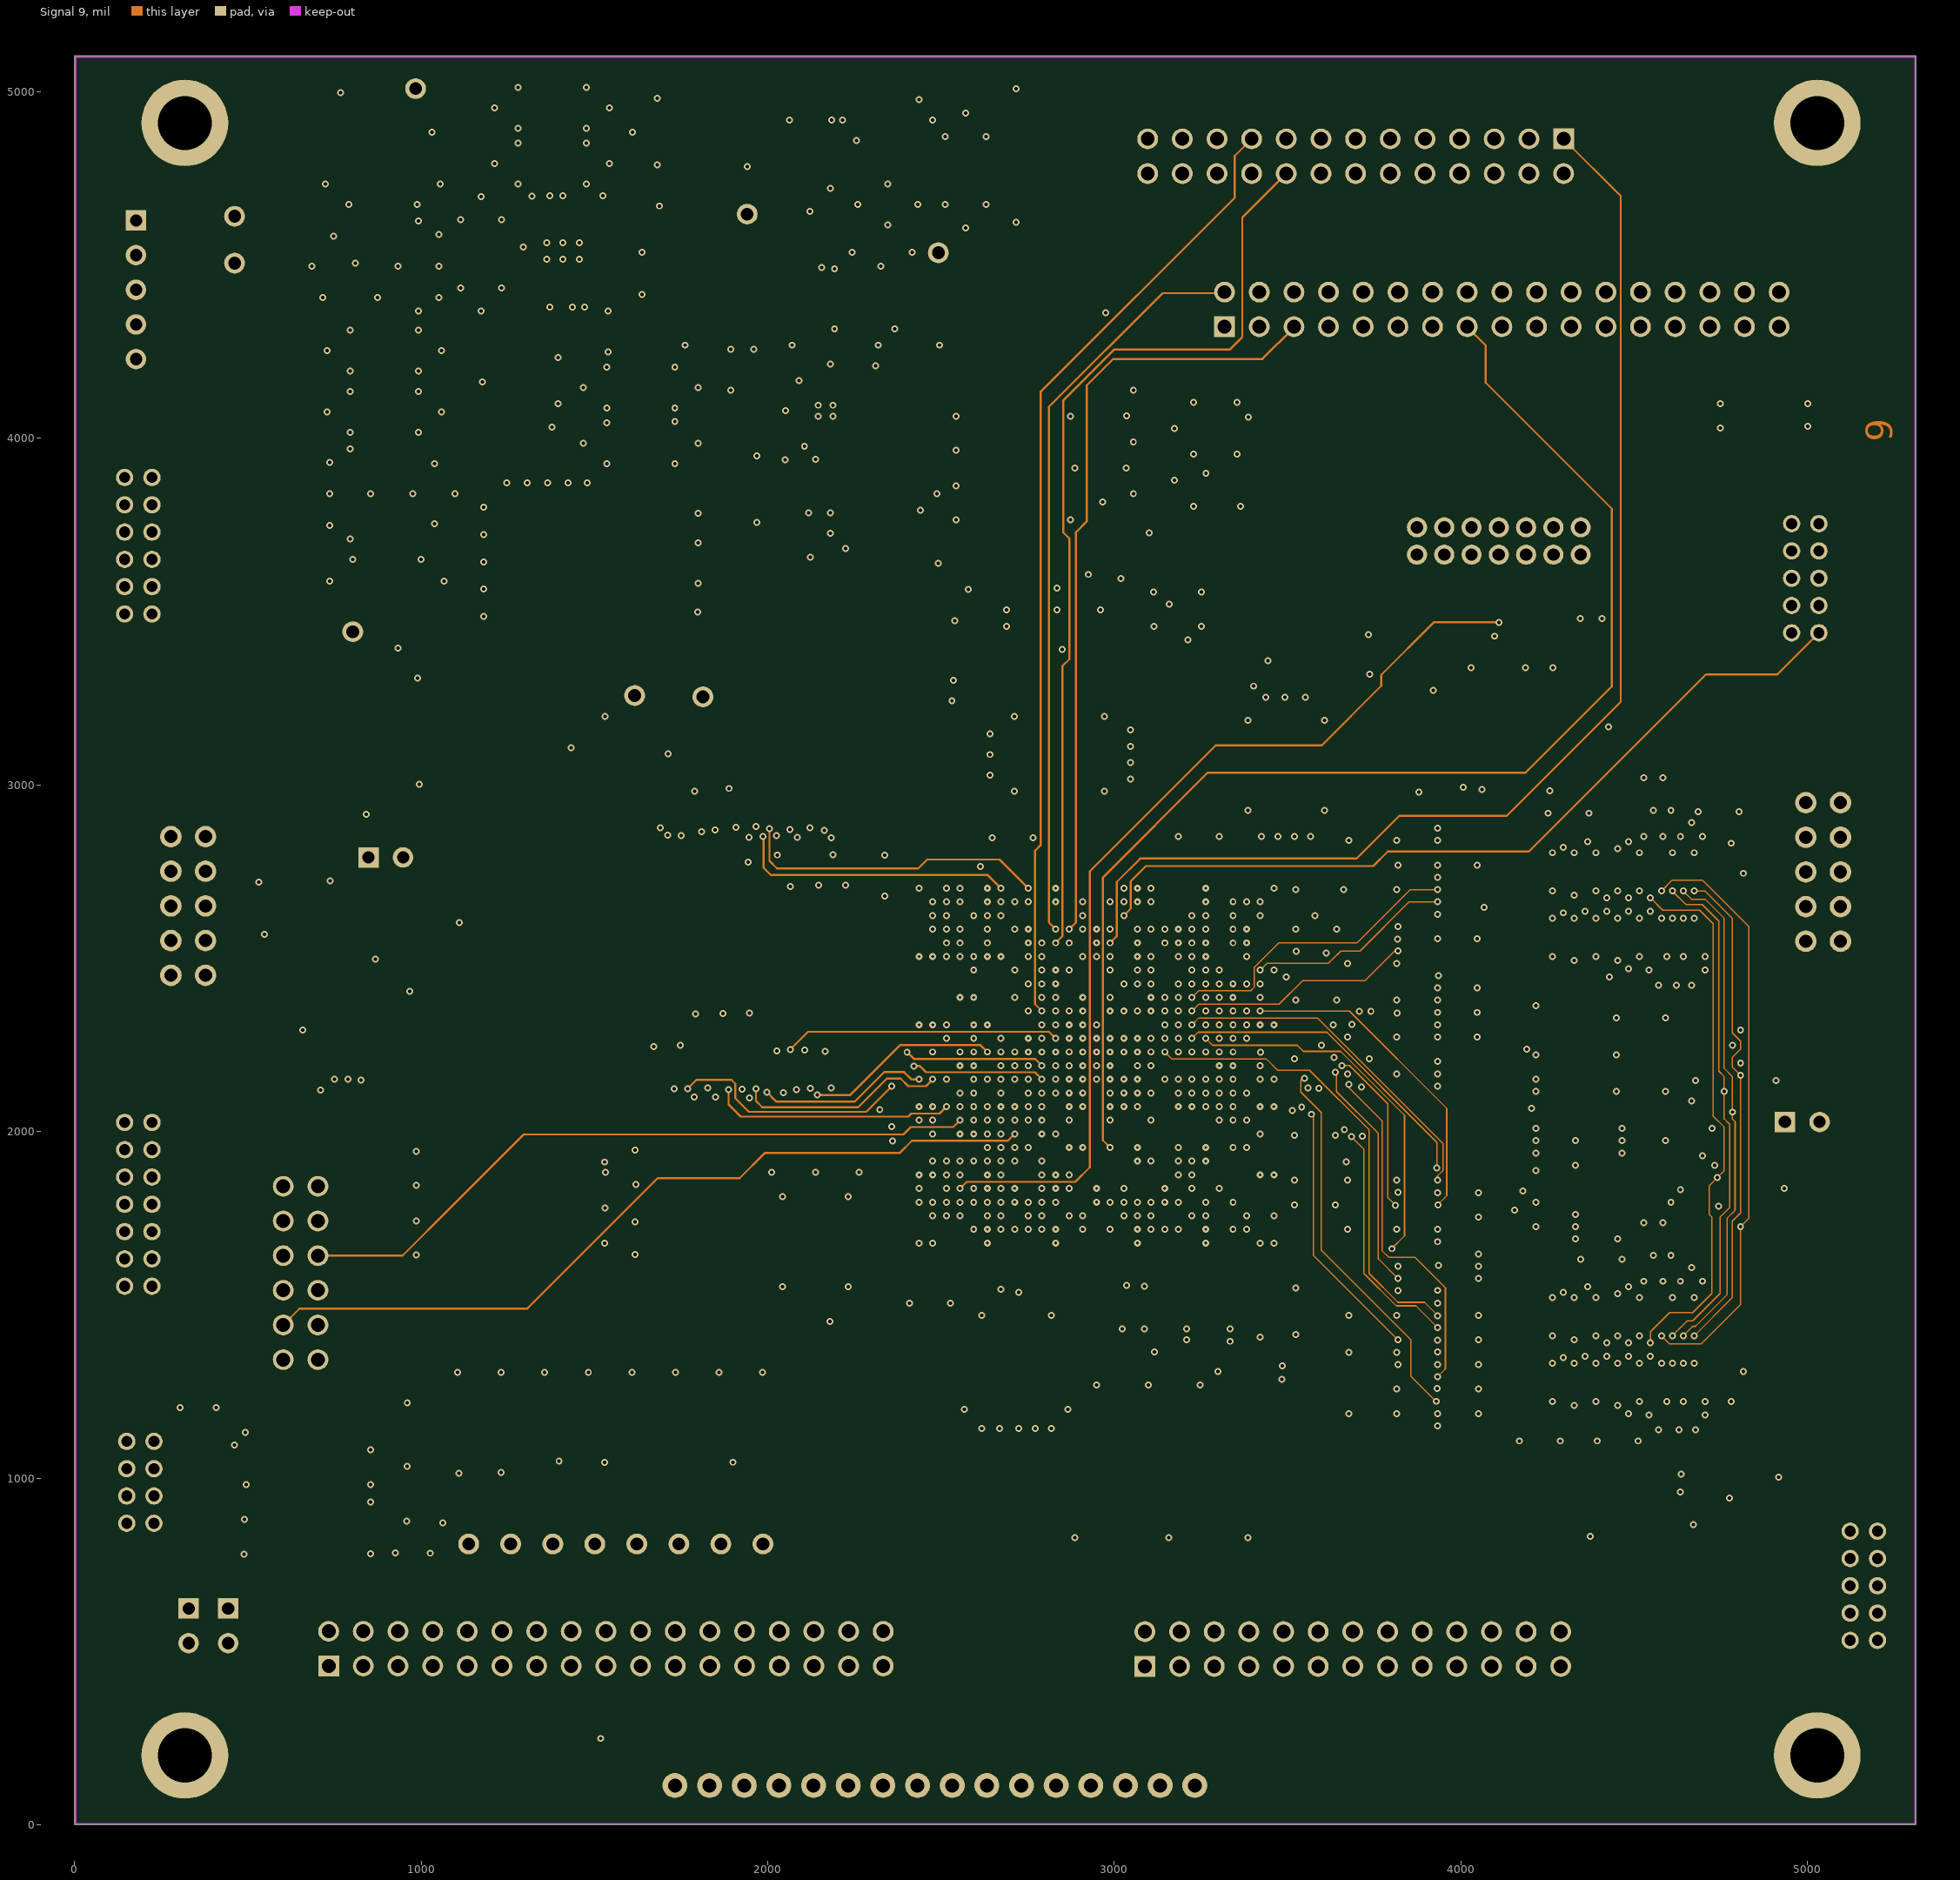
[diagram p9: Signal 9]
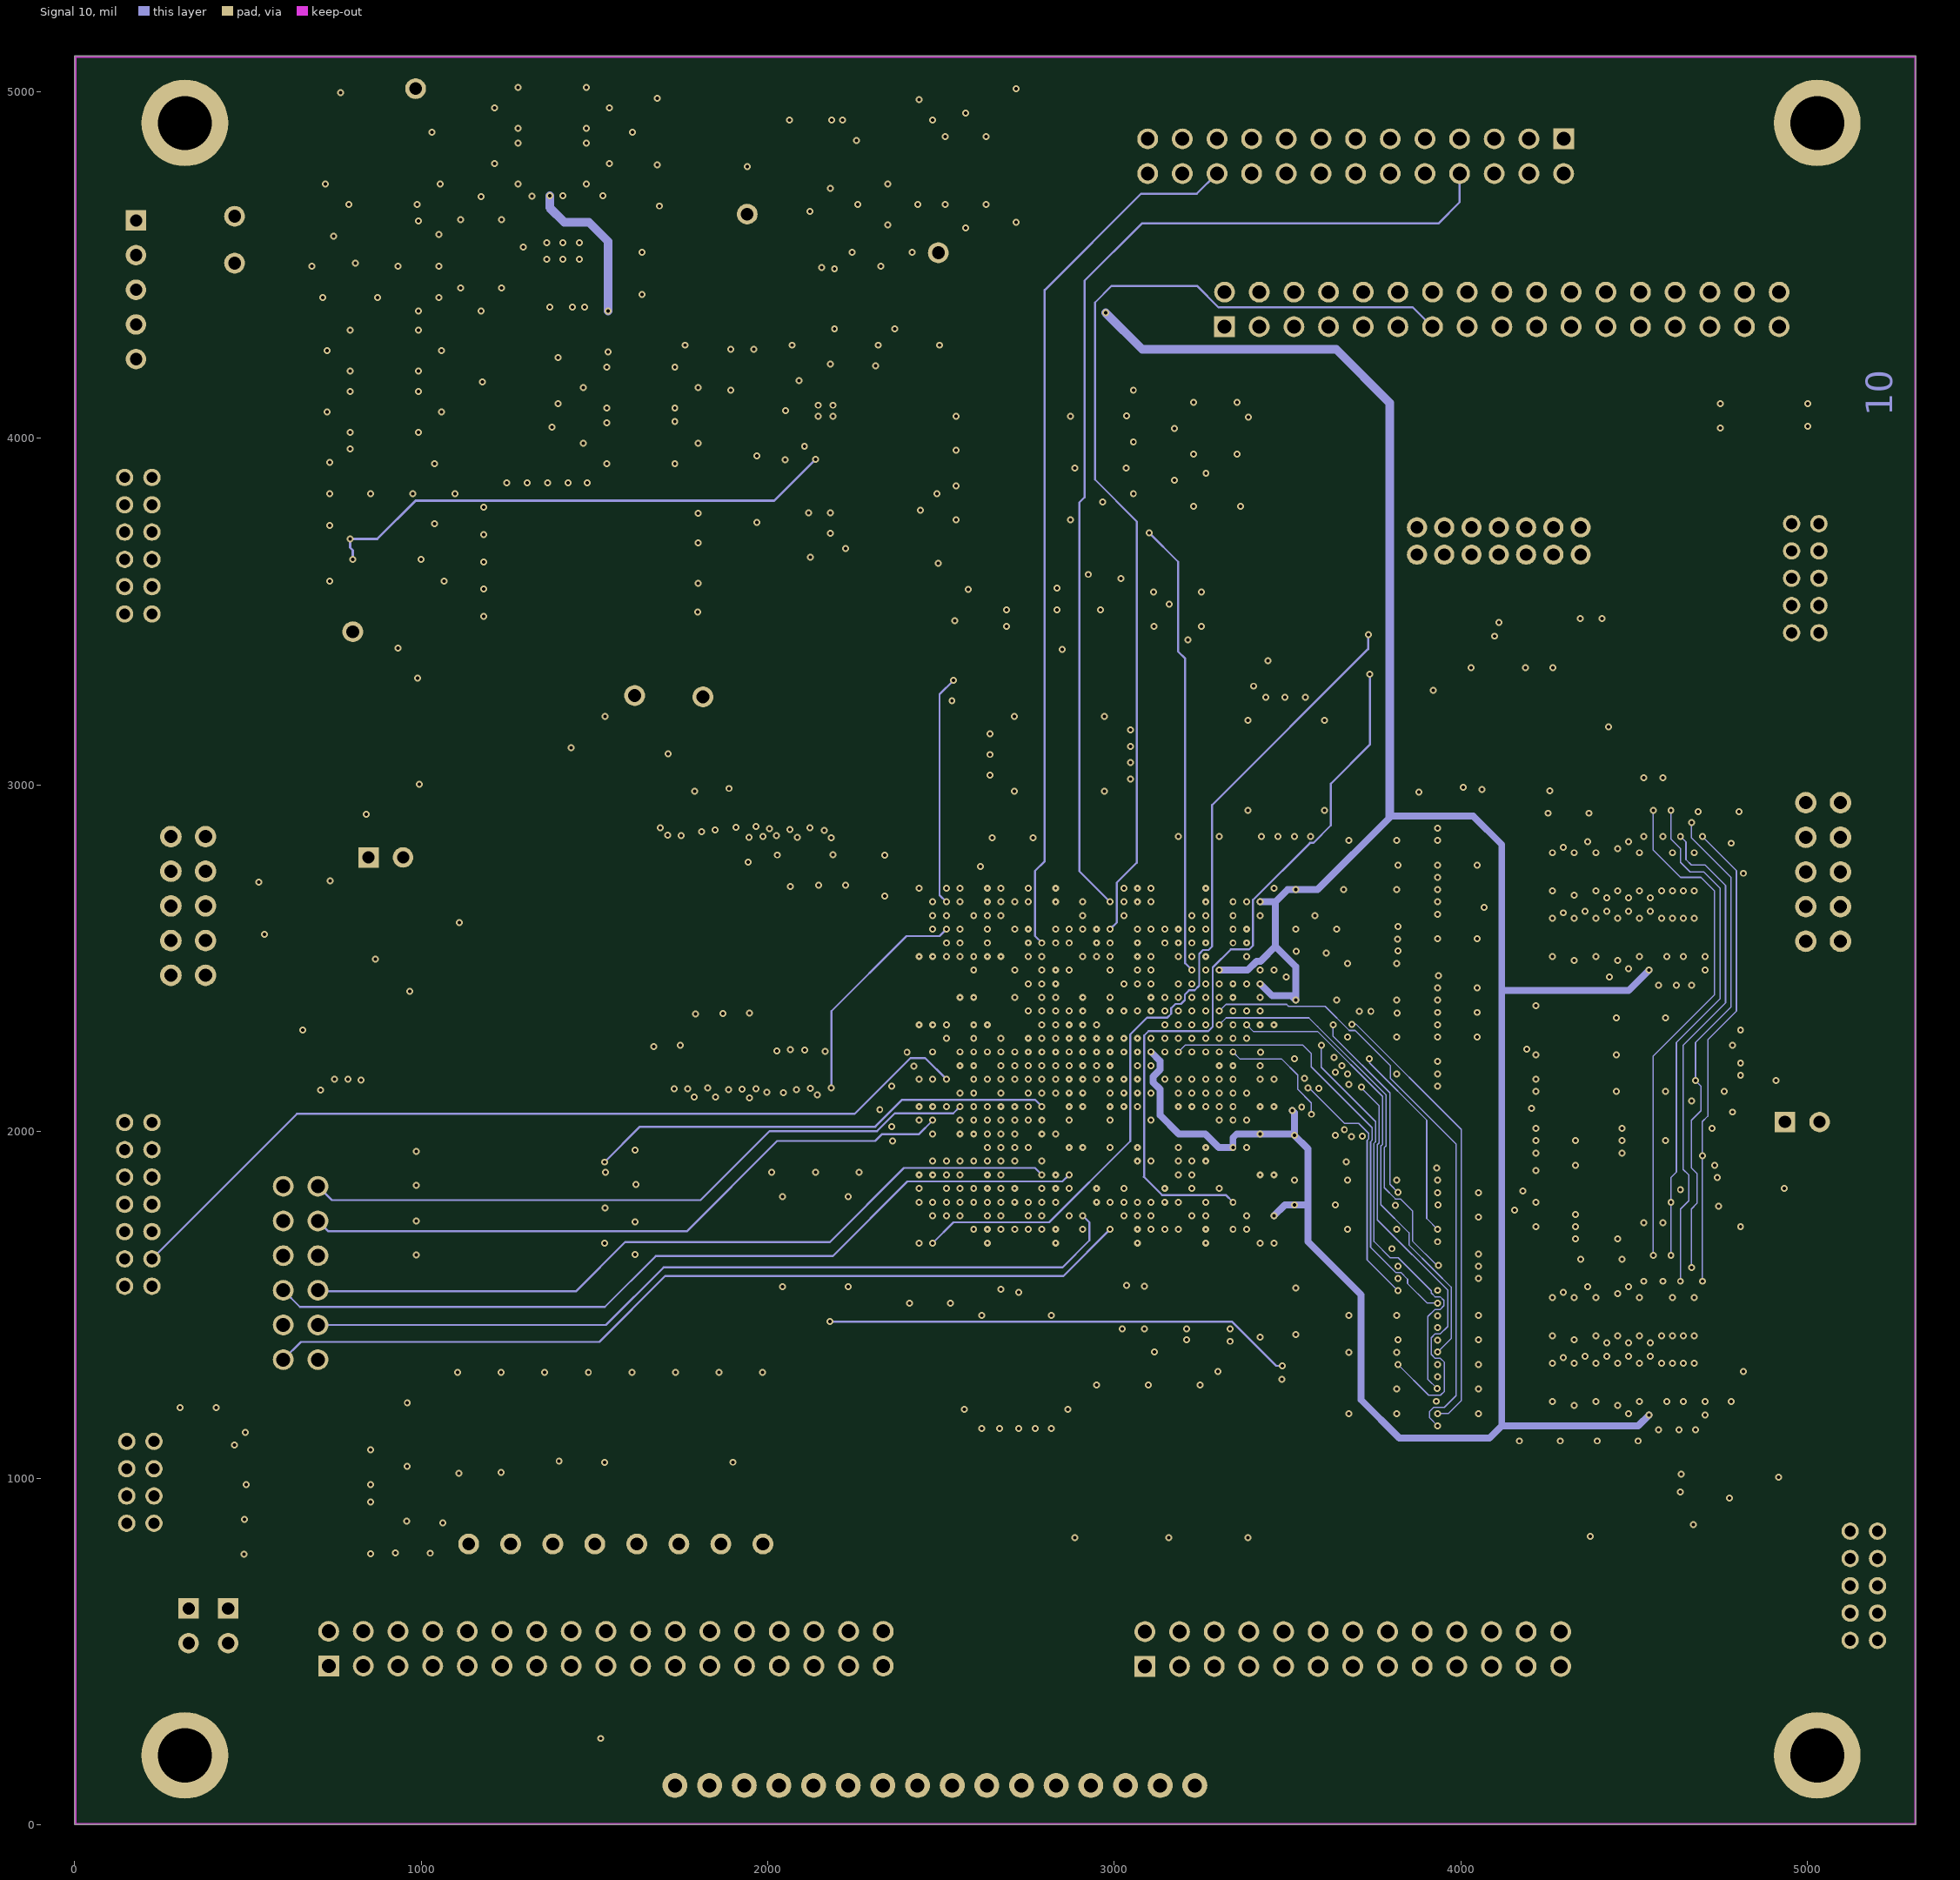
[diagram p10: Signal 10]
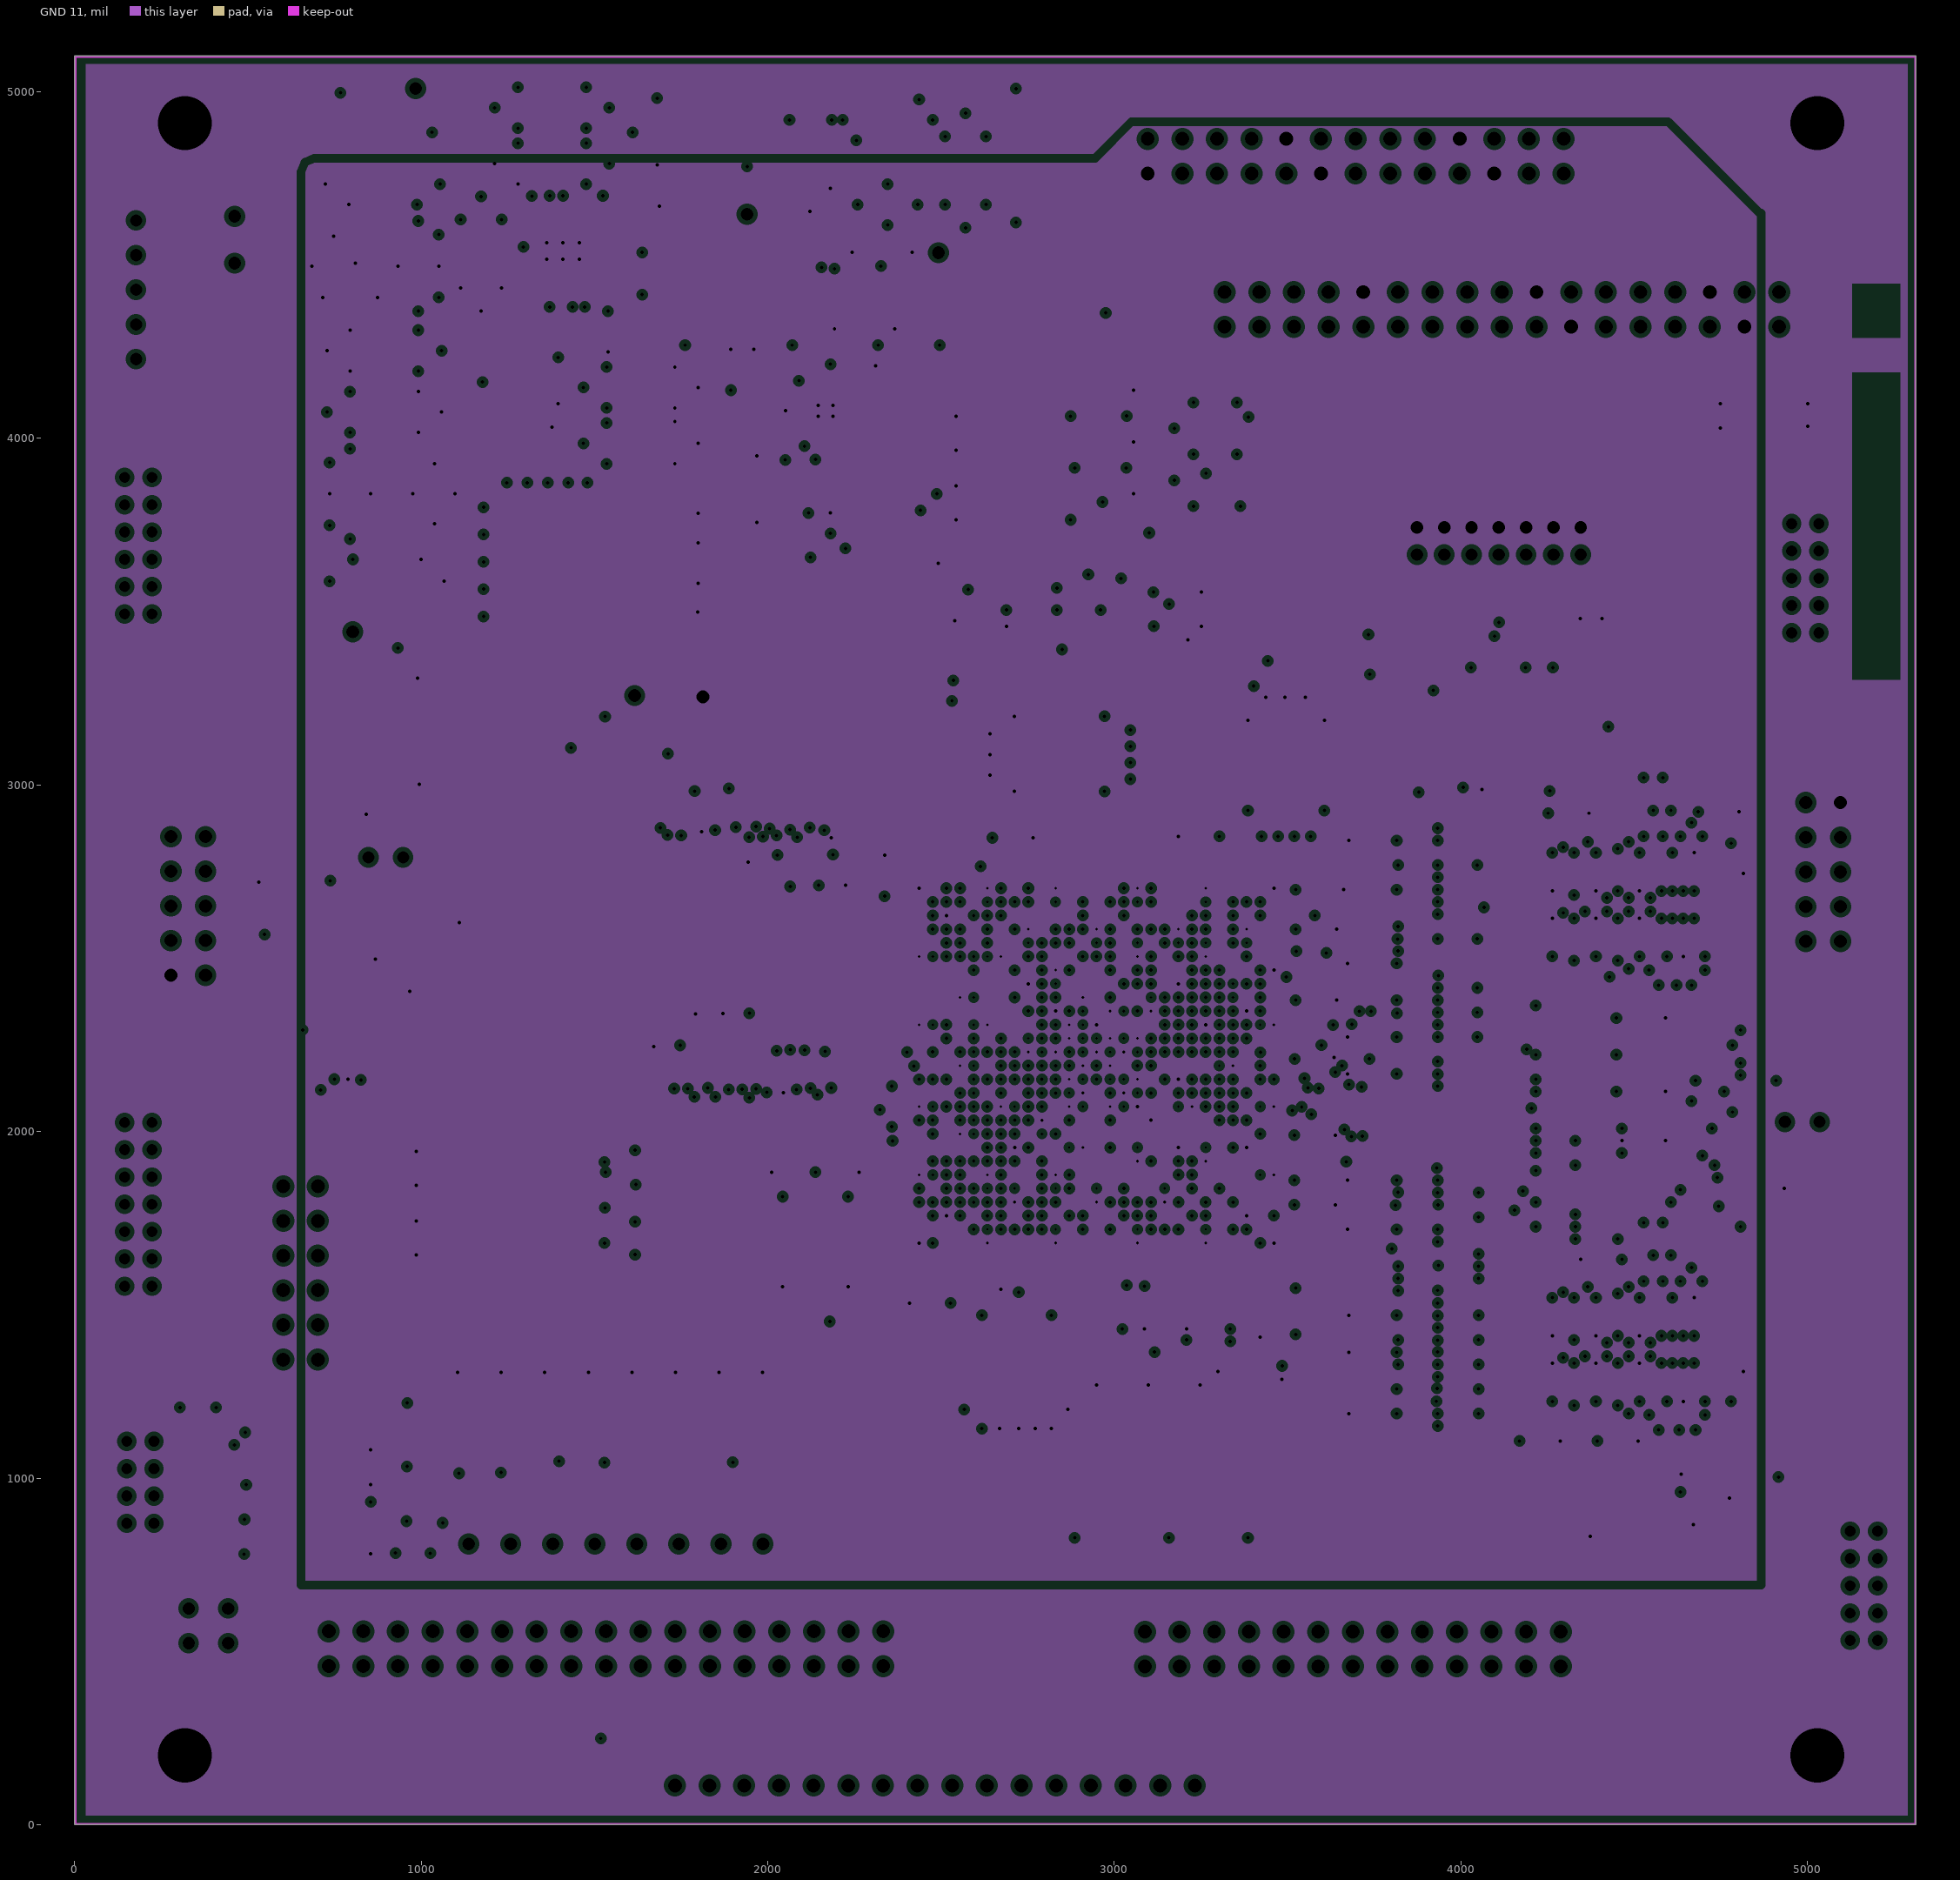
[diagram p11: GND 11, clearances drawn from the general rule]

## Layer stack, top to bottom
Top: signal copper 1.4
Dielectric: core 12.6, FR-4, Dk 4.8
GND 2: plane copper 1.4, net (Multiple Nets)
Dielectric: prepreg 12.6, FR-4, Dk 4.8
Signal 3: signal copper 1.4
Dielectric: core 12.6, FR-4, Dk 4.8
Signal 4: signal copper 1.4
Dielectric: prepreg 12.6, FR-4, Dk 4.8
3.3V 5: plane copper 1.4, net (Multiple Nets)
Dielectric: core 12.6, FR-4, Dk 4.8
Signal 6: signal copper 1.4
Dielectric: prepreg 12.6, FR-4, Dk 4.8
Signal 7: signal copper 1.4
Dielectric: core 12.6, FR-4, Dk 4.8
2.5V 8: plane copper 1.4, net (Multiple Nets)
Dielectric: prepreg 12.6, FR-4, Dk 4.8
Signal 9: signal copper 1.4
Dielectric: core 12.6, FR-4, Dk 4.8
Signal 10: signal copper 1.4
Dielectric: prepreg 12.6, FR-4, Dk 4.8
GND 11: plane copper 1.4, net (Multiple Nets)
Dielectric: core 12.6, FR-4, Dk 4.8
Bottom: signal copper 1.4

## Board outline
5312.54,5103.22 5312.54,0.02 5312.56,0 0,0 0,5103.2 0.01,5103.21

## Design rules (kind name [scope] priority, off if disabled: settings)
Clearance Clearance_Top_PadToPad [ExistsOnLayer('Top') And IsPad vs ExistsOnLayer('Top') And IsPad] p1: gap=7.09
Clearance Clearance_Top_PadToLine [ExistsOnLayer('Top') And IsPad vs ExistsOnLayer('Top') And IsWire] p2: gap=6.69
Clearance Clearance_Top_ViaToPad [ExistsOnLayer('Top') And IsVia vs ExistsOnLayer('Top') And IsPad] p3: gap=7.48
Clearance Clearance_Top_ViaToLine [ExistsOnLayer('Top') And IsVia vs ExistsOnLayer('Top') And IsWire] p4: gap=6.3
Clearance Clearance_Top_ViaToVia [ExistsOnLayer('Top') And IsVia vs ExistsOnLayer('Top') And IsVia] p5: gap=7.48
Clearance Clearance_Top_LineToLine [ExistsOnLayer('Top') And IsWire vs ExistsOnLayer('Top') And IsWire] p6: gap=5.91
Clearance "Clearance_Signal 6_PadToPad" [ExistsOnLayer('Signal 6') And IsPad vs ExistsOnLayer('Signal 6') And IsPad] p7: gap=7.48
Clearance "Clearance_Signal 6_PadToLine" [ExistsOnLayer('Signal 6') And IsPad vs ExistsOnLayer('Signal 6') And IsWire] p8: gap=6.69
Clearance "Clearance_Signal 6_LineToLine" [ExistsOnLayer('Signal 6') And IsWire vs ExistsOnLayer('Signal 6') And IsWire] p9: gap=5.91
Clearance "Clearance_Signal 6_ViaToPad" [ExistsOnLayer('Signal 6') And IsVia vs ExistsOnLayer('Signal 6') And IsPad] p10: gap=7.48
Clearance "Clearance_Signal 6_ViaToLine" [ExistsOnLayer('Signal 6') And IsVia vs ExistsOnLayer('Signal 6') And IsWire] p11: gap=5.71
Clearance "Clearance_Signal 6_ViaToVia" [ExistsOnLayer('Signal 6') And IsVia vs ExistsOnLayer('Signal 6') And IsVia] p12: gap=7.48
Clearance "Clearance_Signal 3_PadToPad" [ExistsOnLayer('Signal 3') And IsPad vs ExistsOnLayer('Signal 3') And IsPad] p13: gap=9.84
Clearance "Clearance_Signal 3_PadToLine" [ExistsOnLayer('Signal 3') And IsPad vs ExistsOnLayer('Signal 3') And IsWire] p14: gap=9.84
Clearance "Clearance_Signal 3_ViaToPad" [ExistsOnLayer('Signal 3') And IsVia vs ExistsOnLayer('Signal 3') And IsPad] p15: gap=9.84
Clearance "Clearance_Signal 3_ViaToVia" [ExistsOnLayer('Signal 3') And IsVia vs ExistsOnLayer('Signal 3') And IsVia] p16: gap=9.45
Clearance "Clearance_Signal 3_ViaToLine" [ExistsOnLayer('Signal 3') And IsVia vs ExistsOnLayer('Signal 3') And IsWire] p17: gap=5.71
Clearance "Clearance_Signal 3_LineToLine" [ExistsOnLayer('Signal 3') And IsWire vs ExistsOnLayer('Signal 3') And IsWire] p18: gap=5.91
Clearance "Clearance_Signal 4_PadToPad" [ExistsOnLayer('Signal 4') And IsPad vs ExistsOnLayer('Signal 4') And IsPad] p19: gap=9.84
Clearance "Clearance_Signal 4_PadToLine" [ExistsOnLayer('Signal 4') And IsPad vs ExistsOnLayer('Signal 4') And IsWire] p20: gap=9.84
Clearance "Clearance_Signal 4_ViaToPad" [ExistsOnLayer('Signal 4') And IsVia vs ExistsOnLayer('Signal 4') And IsPad] p21: gap=9.84
Clearance "Clearance_Signal 4_ViaToVia" [ExistsOnLayer('Signal 4') And IsVia vs ExistsOnLayer('Signal 4') And IsVia] p22: gap=9.45
Clearance "Clearance_Signal 4_ViaToLine" [ExistsOnLayer('Signal 4') And IsVia vs ExistsOnLayer('Signal 4') And IsWire] p23: gap=5.71
Clearance "Clearance_Signal 4_LineToLine" [ExistsOnLayer('Signal 4') And IsWire vs ExistsOnLayer('Signal 4') And IsWire] p24: gap=5.91
Clearance "Clearance_GND 2_PadToPad" [ExistsOnLayer('GND 2') And IsPad vs ExistsOnLayer('GND 2') And IsPad] p25: gap=10
Clearance "Clearance_GND 2_PadToLine" [ExistsOnLayer('GND 2') And IsPad vs ExistsOnLayer('GND 2') And IsWire] p26: gap=10
Clearance "Clearance_GND 2_LineToLine" [ExistsOnLayer('GND 2') And IsWire vs ExistsOnLayer('GND 2') And IsWire] p27: gap=10
Clearance "Clearance_GND 2_ViaToPad" [ExistsOnLayer('GND 2') And IsVia vs ExistsOnLayer('GND 2') And IsPad] p28: gap=10
Clearance "Clearance_GND 2_ViaToLine" [ExistsOnLayer('GND 2') And IsVia vs ExistsOnLayer('GND 2') And IsWire] p29: gap=10
Clearance "Clearance_GND 2_ViaToVia" [ExistsOnLayer('GND 2') And IsVia vs ExistsOnLayer('GND 2') And IsVia] p30: gap=10
Clearance "Clearance_3.3V 5_PadToPad" [ExistsOnLayer('3.3V 5') And IsPad vs ExistsOnLayer('3.3V 5') And IsPad] p31: gap=10
Clearance "Clearance_3.3V 5_PadToLine" [ExistsOnLayer('3.3V 5') And IsPad vs ExistsOnLayer('3.3V 5') And IsWire] p32: gap=10
Clearance "Clearance_3.3V 5_LineToLine" [ExistsOnLayer('3.3V 5') And IsWire vs ExistsOnLayer('3.3V 5') And IsWire] p33: gap=10
Clearance "Clearance_3.3V 5_ViaToPad" [ExistsOnLayer('3.3V 5') And IsVia vs ExistsOnLayer('3.3V 5') And IsPad] p34: gap=10
Clearance "Clearance_3.3V 5_ViaToLine" [ExistsOnLayer('3.3V 5') And IsVia vs ExistsOnLayer('3.3V 5') And IsWire] p35: gap=10
Clearance "Clearance_3.3V 5_ViaToVia" [ExistsOnLayer('3.3V 5') And IsVia vs ExistsOnLayer('3.3V 5') And IsVia] p36: gap=10
Clearance "Clearance_2.5V 8_PadToPad" [ExistsOnLayer('2.5V 8') And IsPad vs ExistsOnLayer('2.5V 8') And IsPad] p37: gap=10
Clearance "Clearance_2.5V 8_PadToLine" [ExistsOnLayer('2.5V 8') And IsPad vs ExistsOnLayer('2.5V 8') And IsWire] p38: gap=10
Clearance "Clearance_2.5V 8_LineToLine" [ExistsOnLayer('2.5V 8') And IsWire vs ExistsOnLayer('2.5V 8') And IsWire] p39: gap=10
Clearance "Clearance_2.5V 8_ViaToPad" [ExistsOnLayer('2.5V 8') And IsVia vs ExistsOnLayer('2.5V 8') And IsPad] p40: gap=10
Clearance "Clearance_2.5V 8_ViaToLine" [ExistsOnLayer('2.5V 8') And IsVia vs ExistsOnLayer('2.5V 8') And IsWire] p41: gap=10
Clearance "Clearance_2.5V 8_ViaToVia" [ExistsOnLayer('2.5V 8') And IsVia vs ExistsOnLayer('2.5V 8') And IsVia] p42: gap=10
Clearance "Clearance_GND 11_PadToPad" [ExistsOnLayer('GND 11') And IsPad vs ExistsOnLayer('GND 11') And IsPad] p43: gap=10
Clearance "Clearance_GND 11_PadToLine" [ExistsOnLayer('GND 11') And IsPad vs ExistsOnLayer('GND 11') And IsWire] p44: gap=10
Clearance "Clearance_GND 11_LineToLine" [ExistsOnLayer('GND 11') And IsWire vs ExistsOnLayer('GND 11') And IsWire] p45: gap=10
Clearance "Clearance_GND 11_ViaToPad" [ExistsOnLayer('GND 11') And IsVia vs ExistsOnLayer('GND 11') And IsPad] p46: gap=10
Clearance "Clearance_GND 11_ViaToLine" [ExistsOnLayer('GND 11') And IsVia vs ExistsOnLayer('GND 11') And IsWire] p47: gap=10
Clearance "Clearance_GND 11_ViaToVia" [ExistsOnLayer('GND 11') And IsVia vs ExistsOnLayer('GND 11') And IsVia] p48: gap=10
Clearance "Clearance_Signal 9_PadToPad" [ExistsOnLayer('Signal 9') And IsPad vs ExistsOnLayer('Signal 9') And IsPad] p49: gap=9.84
Clearance "Clearance_Signal 9_PadToLine" [ExistsOnLayer('Signal 9') And IsPad vs ExistsOnLayer('Signal 9') And IsWire] p50: gap=9.84
Clearance "Clearance_Signal 9_ViaToPad" [ExistsOnLayer('Signal 9') And IsVia vs ExistsOnLayer('Signal 9') And IsPad] p51: gap=9.84
Clearance "Clearance_Signal 9_ViaToVia" [ExistsOnLayer('Signal 9') And IsVia vs ExistsOnLayer('Signal 9') And IsVia] p52: gap=9.45
Clearance "Clearance_Signal 9_ViaToLine" [ExistsOnLayer('Signal 9') And IsVia vs ExistsOnLayer('Signal 9') And IsWire] p53: gap=5.71
Clearance "Clearance_Signal 9_LineToLine" [ExistsOnLayer('Signal 9') And IsWire vs ExistsOnLayer('Signal 9') And IsWire] p54: gap=5.91
Clearance "Clearance_Signal 10_PadToPad" [ExistsOnLayer('Signal 10') And IsPad vs ExistsOnLayer('Signal 10') And IsPad] p55: gap=9.84
Clearance "Clearance_Signal 10_PadToLine" [ExistsOnLayer('Signal 10') And IsPad vs ExistsOnLayer('Signal 10') And IsWire] p56: gap=9.84
Clearance "Clearance_Signal 10_ViaToPad" [ExistsOnLayer('Signal 10') And IsVia vs ExistsOnLayer('Signal 10') And IsPad] p57: gap=9.84
Clearance "Clearance_Signal 10_ViaToVia" [ExistsOnLayer('Signal 10') And IsVia vs ExistsOnLayer('Signal 10') And IsVia] p58: gap=9.45
Clearance "Clearance_Signal 10_ViaToLine" [ExistsOnLayer('Signal 10') And IsVia vs ExistsOnLayer('Signal 10') And IsWire] p59: gap=5.71
Clearance "Clearance_Signal 10_LineToLine" [ExistsOnLayer('Signal 10') And IsWire vs ExistsOnLayer('Signal 10') And IsWire] p60: gap=5.91
Clearance "Clearance_Signal 7_PadToPad" [ExistsOnLayer('Signal 7') And IsPad vs ExistsOnLayer('Signal 7') And IsPad] p61: gap=7.09
Clearance "Clearance_Signal 7_PadToLine" [ExistsOnLayer('Signal 7') And IsPad vs ExistsOnLayer('Signal 7') And IsWire] p62: gap=6.69
Clearance "Clearance_Signal 7_LineToLine" [ExistsOnLayer('Signal 7') And IsWire vs ExistsOnLayer('Signal 7') And IsWire] p63: gap=5.91
Clearance "Clearance_Signal 7_ViaToPad" [ExistsOnLayer('Signal 7') And IsVia vs ExistsOnLayer('Signal 7') And IsPad] p64: gap=7.48
Clearance "Clearance_Signal 7_ViaToLine" [ExistsOnLayer('Signal 7') And IsVia vs ExistsOnLayer('Signal 7') And IsWire] p65: gap=5.71
Clearance "Clearance_Signal 7_ViaToVia" [ExistsOnLayer('Signal 7') And IsVia vs ExistsOnLayer('Signal 7') And IsVia] p66: gap=7.48
Clearance Clearance_Bottom_ViaToPad [ExistsOnLayer('Bottom') And IsVia vs ExistsOnLayer('Bottom') And IsPad] p67: gap=9.84
Clearance Clearance_Bottom_PadToPad [ExistsOnLayer('Bottom') And IsPad vs ExistsOnLayer('Bottom') And IsPad] p68: gap=7.09
Clearance Clearance_Bottom_PadToLine [ExistsOnLayer('Bottom') And IsPad vs ExistsOnLayer('Bottom') And IsWire] p69: gap=7.87
Clearance Clearance_Bottom_ViaToVia [ExistsOnLayer('Bottom') And IsVia vs ExistsOnLayer('Bottom') And IsVia] p70: gap=9.45
Clearance Clearance_Bottom_ViaToLine [ExistsOnLayer('Bottom') And IsVia vs ExistsOnLayer('Bottom') And IsWire] p71: gap=5.71
Clearance Clearance_Bottom_LineToLine [ExistsOnLayer('Bottom') And IsWire vs ExistsOnLayer('Bottom') And IsWire] p72: gap=5.91
Clearance Clearance_Design_HoleToHole [(IsVia Or IsThruPin) vs (IsVia Or IsThruPin)] p73: gap=13
Clearance [All] p74: gap=10
FabricationTestPointUsage TestPointUsage [All] p1: valid=0 allowmultiple=FALSE
FabricationTestpoint Testpoint [All] p1: side=3 testpointundercomponent=TRUE minsize=40 maxsize=100 preferedsize=60 minholesize=0 maxholesize=40 preferedholesize=32 testpointgrid=1 allowsidetop=TRUE allowsidebottom=TRUE usegrid=TRUE gridtolerance=0.01
FanoutControl Fanout_BGA [IsBGA] p1: bgadir=Out bgaviamode=Centered fanoutstyle=BGA fanoutdirection=Alternating viagrid=1 // Fanout_BGA (Default Rule)
HoleSize [All] p1: absolutevalues=TRUE maxlimit=157.48 minlimit=1 maxpercent=80.000 minpercent=20.000
PlaneClearance PadClr_P:EX300Y300D1501 [InPadClass('P:EX300Y300D1501')] p1: clearance=25
PlaneClearance [All] p2: clearance=12
PlaneConnect PadTherm_EF100X50TOP1 [InPadClass('EF100X50TOP1')] p1: planeconnectstyle=NoConnect reliefexpansion=20 reliefentries=4 reliefconductorwidth=10 reliefairgap=10
PlaneConnect PadTherm_EF103X108TOP1 [InPadClass('EF103X108TOP1')] p2: planeconnectstyle=NoConnect reliefexpansion=20 reliefentries=4 reliefconductorwidth=10 reliefairgap=10
PlaneConnect PadTherm_EF11X40TOP1 [InPadClass('EF11X40TOP1')] p3: planeconnectstyle=NoConnect reliefexpansion=20 reliefentries=4 reliefconductorwidth=10 reliefairgap=10
PlaneConnect PadTherm_EF126X157TOP1 [InPadClass('EF126X157TOP1')] p4: planeconnectstyle=NoConnect reliefexpansion=20 reliefentries=4 reliefconductorwidth=10 reliefairgap=10
PlaneConnect PadTherm_EF12X63TOP1 [InPadClass('EF12X63TOP1')] p5: planeconnectstyle=NoConnect reliefexpansion=20 reliefentries=4 reliefconductorwidth=10 reliefairgap=10
PlaneConnect PadTherm_EF12X83TOP1 [InPadClass('EF12X83TOP1')] p6: planeconnectstyle=NoConnect reliefexpansion=20 reliefentries=4 reliefconductorwidth=10 reliefairgap=10
PlaneConnect PadTherm_EF12X94TOP1 [InPadClass('EF12X94TOP1')] p7: planeconnectstyle=NoConnect reliefexpansion=20 reliefentries=4 reliefconductorwidth=10 reliefairgap=10
PlaneConnect PadTherm_EF130X130TOP1 [InPadClass('EF130X130TOP1')] p8: planeconnectstyle=NoConnect reliefexpansion=20 reliefentries=4 reliefconductorwidth=10 reliefairgap=10
PlaneConnect PadTherm_EF134X51TOP1 [InPadClass('EF134X51TOP1')] p9: planeconnectstyle=NoConnect reliefexpansion=20 reliefentries=4 reliefconductorwidth=10 reliefairgap=10
PlaneConnect PadTherm_EF13X13TOP1 [InPadClass('EF13X13TOP1')] p10: planeconnectstyle=NoConnect reliefexpansion=20 reliefentries=4 reliefconductorwidth=10 reliefairgap=10
PlaneConnect PadTherm_EF142X88TOP1 [InPadClass('EF142X88TOP1')] p11: planeconnectstyle=NoConnect reliefexpansion=20 reliefentries=4 reliefconductorwidth=10 reliefairgap=10
PlaneConnect PadTherm_EF146X94TOP1 [InPadClass('EF146X94TOP1')] p12: planeconnectstyle=NoConnect reliefexpansion=20 reliefentries=4 reliefconductorwidth=10 reliefairgap=10
PlaneConnect PadTherm_EF160X104TOP1 [InPadClass('EF160X104TOP1')] p13: planeconnectstyle=NoConnect reliefexpansion=20 reliefentries=4 reliefconductorwidth=10 reliefairgap=10
PlaneConnect PadTherm_EF167X150TOP1 [InPadClass('EF167X150TOP1')] p14: planeconnectstyle=NoConnect reliefexpansion=20 reliefentries=4 reliefconductorwidth=10 reliefairgap=10
PlaneConnect PadTherm_EF16X142TOP1 [InPadClass('EF16X142TOP1')] p15: planeconnectstyle=NoConnect reliefexpansion=20 reliefentries=4 reliefconductorwidth=10 reliefairgap=10
PlaneConnect PadTherm_EF20X20TOP1 [InPadClass('EF20X20TOP1')] p16: planeconnectstyle=NoConnect reliefexpansion=20 reliefentries=4 reliefconductorwidth=10 reliefairgap=10
PlaneConnect PadTherm_EF20X20TOP2 [InPadClass('EF20X20TOP2')] p17: planeconnectstyle=NoConnect reliefexpansion=20 reliefentries=4 reliefconductorwidth=10 reliefairgap=10
PlaneConnect PadTherm_EF22X22TOP1 [InPadClass('EF22X22TOP1')] p18: planeconnectstyle=NoConnect reliefexpansion=20 reliefentries=4 reliefconductorwidth=10 reliefairgap=10
PlaneConnect PadTherm_EF22X57TOP1 [InPadClass('EF22X57TOP1')] p19: planeconnectstyle=NoConnect reliefexpansion=20 reliefentries=4 reliefconductorwidth=10 reliefairgap=10
PlaneConnect PadTherm_EF22X57TOP2 [InPadClass('EF22X57TOP2')] p20: planeconnectstyle=NoConnect reliefexpansion=20 reliefentries=4 reliefconductorwidth=10 reliefairgap=10
PlaneConnect PadTherm_EF24X59TOP1 [InPadClass('EF24X59TOP1')] p21: planeconnectstyle=NoConnect reliefexpansion=20 reliefentries=4 reliefconductorwidth=10 reliefairgap=10
PlaneConnect PadTherm_EF24X87TOP1 [InPadClass('EF24X87TOP1')] p22: planeconnectstyle=NoConnect reliefexpansion=20 reliefentries=4 reliefconductorwidth=10 reliefairgap=10
PlaneConnect PadTherm_EF25X50TOP1 [InPadClass('EF25X50TOP1')] p23: planeconnectstyle=NoConnect reliefexpansion=20 reliefentries=4 reliefconductorwidth=10 reliefairgap=10
PlaneConnect PadTherm_EF28X98TOP1 [InPadClass('EF28X98TOP1')] p24: planeconnectstyle=NoConnect reliefexpansion=20 reliefentries=4 reliefconductorwidth=10 reliefairgap=10
PlaneConnect PadTherm_EF31X59TOP1 [InPadClass('EF31X59TOP1')] p25: planeconnectstyle=NoConnect reliefexpansion=20 reliefentries=4 reliefconductorwidth=10 reliefairgap=10
PlaneConnect PadTherm_EF38X32TOP1 [InPadClass('EF38X32TOP1')] p26: planeconnectstyle=NoConnect reliefexpansion=20 reliefentries=4 reliefconductorwidth=10 reliefairgap=10
PlaneConnect PadTherm_EF40X11TOP1 [InPadClass('EF40X11TOP1')] p27: planeconnectstyle=NoConnect reliefexpansion=20 reliefentries=4 reliefconductorwidth=10 reliefairgap=10
PlaneConnect PadTherm_EF40X40BOT1 [InPadClass('EF40X40BOT1')] p28: planeconnectstyle=NoConnect reliefexpansion=20 reliefentries=4 reliefconductorwidth=10 reliefairgap=10
PlaneConnect PadTherm_EF40X40TOP1 [InPadClass('EF40X40TOP1')] p29: planeconnectstyle=NoConnect reliefexpansion=20 reliefentries=4 reliefconductorwidth=10 reliefairgap=10
PlaneConnect PadTherm_EF40X55TOP1 [InPadClass('EF40X55TOP1')] p30: planeconnectstyle=NoConnect reliefexpansion=20 reliefentries=4 reliefconductorwidth=10 reliefairgap=10
PlaneConnect PadTherm_EF40X56TOP1 [InPadClass('EF40X56TOP1')] p31: planeconnectstyle=NoConnect reliefexpansion=20 reliefentries=4 reliefconductorwidth=10 reliefairgap=10
PlaneConnect PadTherm_EF415X331TOP1 [InPadClass('EF415X331TOP1')] p32: planeconnectstyle=NoConnect reliefexpansion=20 reliefentries=4 reliefconductorwidth=10 reliefairgap=10
PlaneConnect PadTherm_EF41X79TOP1 [InPadClass('EF41X79TOP1')] p33: planeconnectstyle=NoConnect reliefexpansion=20 reliefentries=4 reliefconductorwidth=10 reliefairgap=10
PlaneConnect PadTherm_EF48X55TOP1 [InPadClass('EF48X55TOP1')] p34: planeconnectstyle=NoConnect reliefexpansion=20 reliefentries=4 reliefconductorwidth=10 reliefairgap=10
PlaneConnect PadTherm_EF48X88TOP1 [InPadClass('EF48X88TOP1')] p35: planeconnectstyle=NoConnect reliefexpansion=20 reliefentries=4 reliefconductorwidth=10 reliefairgap=10
PlaneConnect PadTherm_EF50X50TOP1 [InPadClass('EF50X50TOP1')] p36: planeconnectstyle=NoConnect reliefexpansion=20 reliefentries=4 reliefconductorwidth=10 reliefairgap=10
PlaneConnect PadTherm_EF60X60TOP1 [InPadClass('EF60X60TOP1')] p37: planeconnectstyle=NoConnect reliefexpansion=20 reliefentries=4 reliefconductorwidth=10 reliefairgap=10
PlaneConnect PadTherm_EF62X74TOP1 [InPadClass('EF62X74TOP1')] p38: planeconnectstyle=NoConnect reliefexpansion=20 reliefentries=4 reliefconductorwidth=10 reliefairgap=10
PlaneConnect PadTherm_EF63X16TOP1 [InPadClass('EF63X16TOP1')] p39: planeconnectstyle=NoConnect reliefexpansion=20 reliefentries=4 reliefconductorwidth=10 reliefairgap=10
PlaneConnect PadTherm_EF63X16TOP2 [InPadClass('EF63X16TOP2')] p40: planeconnectstyle=NoConnect reliefexpansion=20 reliefentries=4 reliefconductorwidth=10 reliefairgap=10
PlaneConnect PadTherm_EF64X100TOP1 [InPadClass('EF64X100TOP1')] p41: planeconnectstyle=NoConnect reliefexpansion=20 reliefentries=4 reliefconductorwidth=10 reliefairgap=10
PlaneConnect PadTherm_EF65X90TOP1 [InPadClass('EF65X90TOP1')] p42: planeconnectstyle=NoConnect reliefexpansion=20 reliefentries=4 reliefconductorwidth=10 reliefairgap=10
PlaneConnect PadTherm_EF79X71TOP1 [InPadClass('EF79X71TOP1')] p43: planeconnectstyle=NoConnect reliefexpansion=20 reliefentries=4 reliefconductorwidth=10 reliefairgap=10
PlaneConnect PadTherm_EF88X104TOP1 [InPadClass('EF88X104TOP1')] p44: planeconnectstyle=NoConnect reliefexpansion=20 reliefentries=4 reliefconductorwidth=10 reliefairgap=10
PlaneConnect PadTherm_EF90X16TOP1 [InPadClass('EF90X16TOP1')] p45: planeconnectstyle=NoConnect reliefexpansion=20 reliefentries=4 reliefconductorwidth=10 reliefairgap=10
PlaneConnect PadTherm_EF90X16TOP2 [InPadClass('EF90X16TOP2')] p46: planeconnectstyle=NoConnect reliefexpansion=20 reliefentries=4 reliefconductorwidth=10 reliefairgap=10
PlaneConnect PadTherm_P:EX100Y100D621 [InPadClass('P:EX100Y100D621')] p47: planeconnectstyle=Relief reliefexpansion=20 reliefentries=4 reliefconductorwidth=20 reliefairgap=20
PlaneConnect PadTherm_P:EX107Y107D671 [InPadClass('P:EX107Y107D671')] p48: planeconnectstyle=Relief reliefexpansion=20 reliefentries=4 reliefconductorwidth=20 reliefairgap=20
PlaneConnect PadTherm_P:EX107Y107D701 [InPadClass('P:EX107Y107D701')] p49: planeconnectstyle=Relief reliefexpansion=20 reliefentries=4 reliefconductorwidth=20 reliefairgap=20
PlaneConnect PadTherm_P:EX107Y107D711 [InPadClass('P:EX107Y107D711')] p50: planeconnectstyle=Relief reliefexpansion=20 reliefentries=4 reliefconductorwidth=20 reliefairgap=20
PlaneConnect PadTherm_P:EX126Y126D1261 [InPadClass('P:EX126Y126D1261')] p51: planeconnectstyle=Relief reliefexpansion=20 reliefentries=4 reliefconductorwidth=20 reliefairgap=20
PlaneConnect PadTherm_P:EX300Y300D1501 [InPadClass('P:EX300Y300D1501')] p52: planeconnectstyle=Relief reliefexpansion=20 reliefentries=4 reliefconductorwidth=25 reliefairgap=20
PlaneConnect PadTherm_P:EX45Y45D251 [InPadClass('P:EX45Y45D251')] p53: planeconnectstyle=Relief reliefexpansion=20 reliefentries=4 reliefconductorwidth=10 reliefairgap=10
PlaneConnect PadTherm_P:EX50Y50D301 [InPadClass('P:EX50Y50D301')] p54: planeconnectstyle=Relief reliefexpansion=20 reliefentries=4 reliefconductorwidth=20 reliefairgap=10
PlaneConnect PadTherm_P:EX52Y52D351 [InPadClass('P:EX52Y52D351')] p55: planeconnectstyle=Relief reliefexpansion=20 reliefentries=4 reliefconductorwidth=10 reliefairgap=10
PlaneConnect PadTherm_P:EX55Y55D311 [InPadClass('P:EX55Y55D311')] p56: planeconnectstyle=Relief reliefexpansion=20 reliefentries=4 reliefconductorwidth=10 reliefairgap=10
PlaneConnect PadTherm_P:EX57Y57D301 [InPadClass('P:EX57Y57D301')] p57: planeconnectstyle=Relief reliefexpansion=7.5 reliefentries=4 reliefconductorwidth=10 reliefairgap=7.5
PlaneConnect PadTherm_P:EX58Y58D361 [InPadClass('P:EX58Y58D361')] p58: planeconnectstyle=Relief reliefexpansion=20 reliefentries=4 reliefconductorwidth=10 reliefairgap=10
PlaneConnect PadTherm_P:EX59Y59D351 [InPadClass('P:EX59Y59D351')] p59: planeconnectstyle=Relief reliefexpansion=20 reliefentries=4 reliefconductorwidth=10 reliefairgap=10
PlaneConnect PadTherm_P:EX60Y60D371 [InPadClass('P:EX60Y60D371')] p60: planeconnectstyle=Relief reliefexpansion=9.25 reliefentries=4 reliefconductorwidth=12.33 reliefairgap=9.25
PlaneConnect PadTherm_P:EX60Y60D401 [InPadClass('P:EX60Y60D401')] p61: planeconnectstyle=Relief reliefexpansion=20 reliefentries=4 reliefconductorwidth=10 reliefairgap=10
PlaneConnect PadTherm_P:EX62Y62D381 [InPadClass('P:EX62Y62D381')] p62: planeconnectstyle=Relief reliefexpansion=20 reliefentries=4 reliefconductorwidth=20 reliefairgap=20
PlaneConnect PadTherm_P:EX62Y62D421 [InPadClass('P:EX62Y62D421')] p63: planeconnectstyle=Relief reliefexpansion=20 reliefentries=4 reliefconductorwidth=20 reliefairgap=20
PlaneConnect PadTherm_P:EX62Y62D422 [InPadClass('P:EX62Y62D422')] p64: planeconnectstyle=Relief reliefexpansion=20 reliefentries=4 reliefconductorwidth=20 reliefairgap=20
PlaneConnect PadTherm_P:EX63Y63D631 [InPadClass('P:EX63Y63D631')] p65: planeconnectstyle=Relief reliefexpansion=20 reliefentries=4 reliefconductorwidth=10 reliefairgap=10
PlaneConnect PadTherm_P:EX68Y68D461 [InPadClass('P:EX68Y68D461')] p66: planeconnectstyle=Relief reliefexpansion=20 reliefentries=4 reliefconductorwidth=20 reliefairgap=20
PlaneConnect PadTherm_P:EX80Y80D551 [InPadClass('P:EX80Y80D551')] p67: planeconnectstyle=Relief reliefexpansion=20 reliefentries=4 reliefconductorwidth=20 reliefairgap=20
PlaneConnect PadTherm_P:EX87Y87D871 [InPadClass('P:EX87Y87D871')] p68: planeconnectstyle=Relief reliefexpansion=20 reliefentries=4 reliefconductorwidth=20 reliefairgap=20
PlaneConnect PadTherm_P:SX107Y107D671 [InPadClass('P:SX107Y107D671')] p69: planeconnectstyle=Relief reliefexpansion=20 reliefentries=4 reliefconductorwidth=20 reliefairgap=20
PlaneConnect PadTherm_P:SX107Y107D701 [InPadClass('P:SX107Y107D701')] p70: planeconnectstyle=Relief reliefexpansion=20 reliefentries=4 reliefconductorwidth=20 reliefairgap=20
PlaneConnect PadTherm_P:SX50Y50D301 [InPadClass('P:SX50Y50D301')] p71: planeconnectstyle=Relief reliefexpansion=7.5 reliefentries=4 reliefconductorwidth=10 reliefairgap=7.5
PlaneConnect PadTherm_P:SX55Y55D311 [InPadClass('P:SX55Y55D311')] p72: planeconnectstyle=Relief reliefexpansion=20 reliefentries=4 reliefconductorwidth=10 reliefairgap=10
PlaneConnect PadTherm_P:SX59Y59D351 [InPadClass('P:SX59Y59D351')] p73: planeconnectstyle=Relief reliefexpansion=20 reliefentries=4 reliefconductorwidth=10 reliefairgap=10
PlaneConnect PadTherm_P:SX62Y62D421 [InPadClass('P:SX62Y62D421')] p74: planeconnectstyle=Relief reliefexpansion=20 reliefentries=4 reliefconductorwidth=20 reliefairgap=20
PlaneConnect PadTherm_P:SX62Y62D422 [InPadClass('P:SX62Y62D422')] p75: planeconnectstyle=Relief reliefexpansion=20 reliefentries=4 reliefconductorwidth=20 reliefairgap=20
PlaneConnect PadTherm_P:SX68Y68D461 [InPadClass('P:SX68Y68D461')] p76: planeconnectstyle=Relief reliefexpansion=20 reliefentries=4 reliefconductorwidth=20 reliefairgap=20
PlaneConnect [All] p77: planeconnectstyle=Direct reliefexpansion=20 reliefentries=4 reliefconductorwidth=10 reliefairgap=10
PolygonConnect [All] p1: connectstyle=Relief reliefconductorwidth=10 reliefentries=4 polygonreliefangle="90 Angle"
RoutingLayers RoutingLayers_1 [(InNet('GND') OR InNet('+0.9V') OR InNet('+1.2V') OR InNet('+1.8V') OR InNet('+2.5V') OR InNet('+3.3V') OR InNet('+5V') OR InNet('+VIN'))] p1: top layer_v5=FALSE mid layer 1_v5=FALSE mid layer 2_v5=FALSE mid layer 3_v5=FALSE mid layer 4_v5=FALSE mid layer 5_v5=FALSE mid layer 6_v5=FALSE bottom layer_v5=FALSE
RoutingLayers [All] p2: top layer_v5=TRUE mid layer 1_v5=TRUE mid layer 2_v5=TRUE mid layer 3_v5=TRUE mid layer 4_v5=TRUE mid layer 5_v5=TRUE mid layer 6_v5=TRUE bottom layer_v5=TRUE
RoutingVias [All] p1: holewidth=10 width=20 viastyle="Through Hole" minholewidth=8 minwidth=20 maxholewidth=10 maxwidth=20
SilkToSilkClearance [All] p1: silktosilkclearance=6
SilkscreenOverComponentPads [All] p1: minsilkscreentomaskgap=10
SolderMaskExpansion [All] p1: expansion=4
Width [All] p1: maxlimit=100 minlimit=4 preferedwidth=5.91
19 further rules are at their usual default settings.

## Classes and differential pairs
net class PARALLEL_FLASH_D[0..15]: PARALLEL_FLASH_D0 PARALLEL_FLASH_D1 PARALLEL_FLASH_D2 PARALLEL_FLASH_D3 PARALLEL_FLASH_D4 PARALLEL_FLASH_D5 PARALLEL_FLASH_D6 PARALLEL_FLASH_D7 PARALLEL_FLASH_D8 PARALLEL_FLASH_D9 PARALLEL_FLASH_D10 PARALLEL_FLASH_D11 PARALLEL_FLASH_D12 PARALLEL_FLASH_D13 PARALLEL_FLASH_D14 PARALLEL_FLASH_D15
net class PARALLEL_FLASH_A[0..23]: PARALLEL_FLASH_A0 PARALLEL_FLASH_A1 PARALLEL_FLASH_A2 PARALLEL_FLASH_A3 PARALLEL_FLASH_A4 PARALLEL_FLASH_A5 PARALLEL_FLASH_A6 PARALLEL_FLASH_A7 PARALLEL_FLASH_A8 PARALLEL_FLASH_A9 PARALLEL_FLASH_A10 PARALLEL_FLASH_A11 PARALLEL_FLASH_A12 PARALLEL_FLASH_A13 PARALLEL_FLASH_A14 PARALLEL_FLASH_A15 PARALLEL_FLASH_A16 PARALLEL_FLASH_A17 PARALLEL_FLASH_A18 PARALLEL_FLASH_A19 PARALLEL_FLASH_A20 PARALLEL_FLASH_A21 PARALLEL_FLASH_A22 PARALLEL_FLASH_A23
component class "System Control - Parallel Flash": C32 C100 R14 R21 R26 R146 R147 U6
component class "System Control - Bank2": J9 R27 R30 R32
component class "System Control - Serial Flash": C18 C19 C20 C48 C51 C52 R11 R12 R13 R15 R150 R154 R156 R163 U2 U12
component class "System Control - Serial Port": C5 C6 C10 C13 C14 C16 C79 C80 C81 C248 C252 C253 J1 J8 R9 R10 R129 R294 U4 U23 W1 W2
net class DDR_A[0..12]: DDR_A0 DDR_A1 DDR_A2 DDR_A3 DDR_A4 DDR_A5 DDR_A6 DDR_A7 DDR_A8 DDR_A9 DDR_A10 DDR_A11 DDR_A12
net class DDR_D[0..31]: DDR_D0 DDR_D1 DDR_D2 DDR_D3 DDR_D4 DDR_D5 DDR_D6 DDR_D7 DDR_D8 DDR_D9 DDR_D10 DDR_D11 DDR_D12 DDR_D13 DDR_D14 DDR_D15 DDR_D16 DDR_D17 DDR_D18 DDR_D19 DDR_D20 DDR_D21 DDR_D22 DDR_D23 DDR_D24 DDR_D25 DDR_D26 DDR_D27 DDR_D28 DDR_D29 DDR_D30 DDR_D31
pad class EF100X50TOP1: S3-1 S3-2 S3-3 S3-4 S3-5 S3-6 S3-7 S3-8
pad class EF103X108TOP1: D4-1 D4-2
pad class EF11X40TOP1: U1-1 U1-2 U1-3 U1-4 U1-5 U1-6 U1-7 U1-15 U1-16 U1-17 U1-18 U1-19 U1-20 U1-21
pad class EF126X157TOP1: J17-51 J17-52
pad class EF12X63TOP1: U7-1 U7-2 U7-3 U7-4 U7-5 U7-6 U7-7 U7-8 U7-9 U7-10 U7-11 U7-12 U7-13 U7-14 U7-15 U7-16 U7-17 U7-18 U7-19 U7-20 U7-21 U7-22 U7-23 U7-24 U7-25 U7-26 U7-27 U7-28 U7-29 U7-30 U7-31 U7-32 U7-33 U7-34 U7-35 U7-36 U7-37 U7-38 U7-39 U7-40 U7-41 U7-42 U7-43 U7-44 U7-45 U7-46 U7-47 U7-48 U7-49 U7-50 U7-51 U7-52 U7-53 U7-54 U7-55 U7-56 U8-1 U8-2 U8-3 U8-4 U8-5 U8-6 U8-7 U8-8 U8-9 U8-10 U8-11 U8-12 U8-13 U8-14 U8-15 U8-16 U8-17 U8-18 U8-19 U8-20 U8-21 U8-22 U8-23 U8-24 U9-1 U9-2 U9-3 U9-4 U9-5 U9-6 U9-7 U9-8 U9-9 U9-10 U9-11 U9-12 U9-13 U9-14 U9-15 U9-16 U9-17 U9-18 U9-19 U9-20 U9-21 U9-22 U9-23 U9-24 U20-1 U20-2 U20-3 U20-4 U20-5 U20-6 U20-7 U20-8 U20-9 U20-10 U20-11 U20-12 U20-13 U20-14 U20-15 U20-16 U20-17 U20-18 U20-19 U20-20
pad class EF12X83TOP1: U5-1 U5-2 U5-3 U5-4 U5-5 U5-6 U5-7 U5-8 U5-9 U5-10 U5-11 U5-12 U5-13 U5-14 U5-15 U5-16 U5-17 U5-18 U5-19 U5-20 U5-21 U5-22 U5-23 U5-24 U5-25 U5-26 U5-27 U5-28 U5-29 U5-30 U5-31 U5-32 U5-33 U5-34 U5-35 U5-36 U5-37 U5-38 U5-39 U5-40 U5-41 U5-42 U5-43 U5-44 U5-45 U5-46 U5-47 U5-48 U5-49 U5-50 U5-51 U5-52 U5-53 U5-54 U5-55 U5-56 U5-57 U5-58 U5-59 U5-60 U5-61 U5-62 U5-63 U5-64 U5-65 U5-66 U5-67 U5-68 U5-69 U5-70 U5-71 U5-72 U5-73 U5-74 U5-75 U5-76 U5-77 U5-78 U5-79 U5-80 U5-81 U5-82 U5-83 U5-84 U5-85 U5-86 U5-87 U5-88 U5-89 U5-90 U5-91 U5-92 U5-93 U5-94 U5-95 U5-96 U5-97 U5-98 U5-99 U5-100 U5-101 U5-102 U5-103 U5-104 U5-105 U5-106 U5-107 U5-108 U5-109 U5-110 U5-111 U5-112 U5-113 U5-114 U5-115 U5-116 U5-117 U5-118 U5-119 U5-120 U5-121 U5-122 U5-123 U5-124 U5-125 U5-126 U5-127 U5-128 U5-129 U5-130 U5-131 U5-132 U5-133 U5-134 U5-135 U5-136 U5-137 U5-138 U5-139 U5-140 U5-141 U5-142 U5-143 U5-144
pad class EF12X94TOP1: U14-1 U14-2 U14-3 U14-4 U14-5 U14-6 U14-7 U14-8 U14-9 U14-10 U14-11 U14-12 U14-13 U14-14 U14-15 U14-16 U14-17 U14-18 U14-19 U14-20 U14-21 U14-22 U14-23 U14-24 U14-25 U14-26 U14-27 U14-28 U14-29 U14-30 U14-31 U14-32 U14-33 U14-34 U14-35 U14-36 U14-37 U14-38 U14-39 U14-40 U14-41 U14-42 U14-43 U14-44 U14-45 U14-46 U14-47 U14-48 U14-49 U14-50 U14-51 U14-52 U14-53 U14-54 U14-55 U14-56 U14-57 U14-58 U14-59 U14-60 U14-61 U14-62 U14-63 U14-64 U14-65 U14-66 U14-67 U14-68 U14-69 U14-70 U14-71 U14-72 U14-73 U14-74 U14-75 U14-76 U14-77 U14-78 U14-79 U14-80 U14-81 U14-82 U14-83 U14-84 U14-85 U14-86 U14-87 U14-88 U14-89 U14-90 U14-91 U14-92 U14-93 U14-94 U14-95 U14-96 U14-97 U14-98 U14-99 U14-100 U14-101 U14-102 U14-103 U14-104 U14-105 U14-106 U14-107 U14-108 U14-109 U14-110 U14-111 U14-112 U14-113 U14-114 U14-115 U14-116 U14-117 U14-118 U14-119 U14-120 U14-121 U14-122 U14-123 U14-124 U14-125 U14-126 U14-127 U14-128
pad class EF130X130TOP1: U1-30
pad class EF134X51TOP1: L1-1 L1-2
pad class EF13X13TOP1: U23-A1 U23-A2 U23-A3 U23-A7 U23-A8 U23-A9 U23-B1 U23-B2 U23-B3 U23-B7 U23-B8 U23-B9 U23-C1 U23-C2 U23-C3 U23-C7 U23-C8 U23-C9 U23-D1 U23-D2 U23-D3 U23-D7 U23-D8 U23-D9 U23-E1 U23-E2 U23-E3 U23-E7 U23-E8 U23-E9 U23-F1 U23-F2 U23-F3 U23-F7 U23-F8 U23-F9 U23-G1 U23-G2 U23-G3 U23-G7 U23-G8 U23-G9 U23-H1 U23-H2 U23-H3 U23-H7 U23-H8 U23-H9 U23-J1 U23-J2 U23-J3 U23-J7 U23-J8 U23-J9 U23-K2 U23-K3 U23-K7 U23-K8 U23-K9 U23-L1 U23-L2 U23-L3 U23-L7 U23-L8 U23-M2 U23-M3 U23-M7 U23-M8 U23-M9 U23-N1 U23-N2 U23-N3 U23-N7 U23-N8 U23-P2 U23-P3 U23-P7 U23-P8 U23-P9 U23-R1 U23-R2 U23-R3 U23-R7 U23-R8 U24-A1 U24-A2 U24-A3 U24-A7 U24-A8 U24-A9 U24-B1 U24-B2 U24-B3 U24-B7 U24-B8 U24-B9 U24-C1 U24-C2 U24-C3 U24-C7 U24-C8 U24-C9 U24-D1 U24-D2 U24-D3 U24-D7 U24-D8 U24-D9 U24-E1 U24-E2 U24-E3 U24-E7 U24-E8 U24-E9 U24-F1 U24-F2 U24-F3 U24-F7 U24-F8 U24-F9 U24-G1 U24-G2 U24-G3 U24-G7 U24-G8 U24-G9 U24-H1 U24-H2 U24-H3 U24-H7 U24-H8 U24-H9 U24-J1 U24-J2 U24-J3 U24-J7 U24-J8 U24-J9 U24-K2 U24-K3 U24-K7 U24-K8 U24-K9 U24-L1 U24-L2 U24-L3 U24-L7 U24-L8 U24-M2 U24-M3 U24-M7 U24-M8 U24-M9 U24-N1 U24-N2 U24-N3 U24-N7 U24-N8 U24-P2 U24-P3 U24-P7 U24-P8 U24-P9 U24-R1 U24-R2 U24-R3 U24-R7 U24-R8
pad class EF142X88TOP1: Q1-D1 U19-4 U21-4 U22-4
pad class EF146X94TOP1: S2-2
pad class EF160X104TOP1: C18-N C18-P C68-N C68-P C80-N C80-P C92-N C92-P C104-N C104-P C116-N C116-P C131-N C131-P C219-N C219-P
pad class EF167X150TOP1: F1-1 F1-2
pad class EF20X20TOP1: U1-29
pad class EF20X20TOP2: U4-A1 U4-A2 U4-A3 U4-A4 U4-A5 U4-A6 U4-A7 U4-A8 U4-A9 U4-A10 U4-A11 U4-A12 U4-A13 U4-A14 U4-A15 U4-A16 U4-A17 U4-A18 U4-A19 U4-A20 U4-A21 U4-A22 U4-A23 U4-A24 U4-A25 U4-A26 U4-AA1 U4-AA2 U4-AA3 U4-AA4 U4-AA5 U4-AA6 U4-AA7 U4-AA8 U4-AA9 U4-AA10 U4-AA11 U4-AA12 U4-AA13 U4-AA14 U4-AA15 U4-AA16 U4-AA17 U4-AA18 U4-AA19 U4-AA20 U4-AA21 U4-AA22 U4-AA23 U4-AA24 U4-AA25 U4-AA26 U4-AB1 U4-AB2 U4-AB3 U4-AB4 U4-AB5 U4-AB6 U4-AB7 U4-AB8 U4-AB9 U4-AB10 U4-AB11 U4-AB12 U4-AB13 U4-AB14 U4-AB15 U4-AB16 U4-AB17 U4-AB18 U4-AB19 U4-AB20 U4-AB21 U4-AB22 U4-AB23 U4-AB24 U4-AB25 U4-AB26 U4-AC1 U4-AC2 U4-AC3 U4-AC4 U4-AC5 U4-AC6 U4-AC7 U4-AC8 U4-AC9 U4-AC10 U4-AC11 U4-AC12 U4-AC13 U4-AC14 U4-AC15 U4-AC16 U4-AC17 U4-AC18 U4-AC19 U4-AC20 U4-AC21 U4-AC22 U4-AC23 U4-AC24 U4-AC25 U4-AC26 U4-AD1 U4-AD2 U4-AD3 U4-AD4 U4-AD5 U4-AD6 U4-AD7 U4-AD8 U4-AD9 U4-AD10 U4-AD11 U4-AD12 U4-AD13 U4-AD14 U4-AD15 U4-AD16 U4-AD17 U4-AD18 U4-AD19 U4-AD20 U4-AD21 U4-AD22 U4-AD23 U4-AD24 U4-AD25 U4-AD26 U4-AE1 U4-AE2 U4-AE3 U4-AE4 U4-AE5 U4-AE6 U4-AE7 U4-AE8 U4-AE9 U4-AE10 U4-AE11 U4-AE12 U4-AE13 U4-AE14 U4-AE15 U4-AE16 U4-AE17 U4-AE18 U4-AE19 U4-AE20 U4-AE21 U4-AE22 U4-AE23 U4-AE24 U4-AE25 U4-AE26 U4-AF1 U4-AF2 U4-AF3 U4-AF4 U4-AF5 U4-AF6 U4-AF7 U4-AF8 U4-AF9 U4-AF10 U4-AF11 U4-AF12 U4-AF13 U4-AF14 U4-AF15 U4-AF16 U4-AF17 U4-AF18 U4-AF19 U4-AF20 U4-AF21 U4-AF22 U4-AF23 U4-AF24 U4-AF25 U4-AF26 U4-B1 U4-B2 U4-B3 U4-B4 U4-B5 U4-B6 U4-B7 U4-B8 U4-B9 U4-B10 U4-B11 U4-B12 U4-B13 U4-B14 U4-B15 U4-B16 U4-B17 U4-B18 U4-B19 U4-B20 U4-B21 U4-B22 U4-B23 U4-B24 U4-B25 U4-B26 U4-C1 U4-C2 U4-C3 U4-C4 U4-C5 U4-C6 U4-C7 U4-C8 U4-C9 U4-C10 U4-C11 U4-C12 U4-C13 U4-C14 U4-C15 U4-C16 U4-C17 U4-C18 U4-C19 U4-C20 U4-C21 U4-C22 U4-C23 U4-C24 U4-C25 U4-C26 U4-D1 U4-D2 U4-D3 U4-D4 U4-D5 U4-D6 U4-D7 U4-D8 U4-D9 U4-D10 U4-D11 U4-D12 U4-D13 U4-D14 U4-D15 U4-D16 U4-D17 U4-D18 U4-D19 U4-D20 U4-D21 U4-D22 U4-D23 U4-D24 U4-D25 U4-D26 U4-E1 U4-E2 U4-E3 U4-E4 U4-E5 U4-E6 U4-E7 U4-E8 U4-E9 U4-E10 U4-E11 U4-E12 U4-E13 U4-E14 U4-E15 U4-E16 U4-E17 U4-E18 U4-E19 U4-E20 U4-E21 U4-E22 U4-E23 U4-E24 U4-E25 U4-E26 U4-F1 U4-F2 U4-F3 U4-F4 U4-F5 U4-F6 U4-F7 U4-F8 U4-F9 U4-F10 U4-F11 U4-F12 U4-F13 U4-F14 U4-F15 U4-F16 U4-F17 U4-F18 U4-F19 U4-F20 U4-F21 U4-F22 U4-F23 U4-F24 U4-F25 U4-F26 U4-G1 U4-G2 U4-G3 U4-G4 U4-G5 U4-G6 U4-G7 U4-G8 U4-G9 U4-G10 U4-G11 U4-G12 U4-G13 U4-G14 U4-G15 U4-G16 U4-G17 U4-G18 U4-G19 U4-G20 U4-G21 U4-G22 U4-G23 U4-G24 U4-G25 U4-G26 U4-H1 U4-H2 U4-H3 U4-H4 U4-H5 U4-H6 U4-H7 U4-H8 U4-H9 U4-H10 U4-H11 U4-H12 U4-H13 U4-H14 U4-H15 U4-H16 U4-H17 U4-H18 U4-H19 U4-H20 U4-H21 U4-H22 U4-H23 U4-H24 U4-H25 U4-H26 U4-J1 U4-J2 U4-J3 U4-J4 U4-J5 U4-J6 U4-J7 U4-J8 U4-J9 U4-J10 U4-J11 U4-J12 U4-J13 U4-J14 U4-J15 U4-J16 U4-J17 U4-J18 U4-J19 U4-J20 U4-J21 U4-J22 U4-J23 U4-J24 U4-J25 U4-J26 U4-K1 U4-K2 U4-K3 U4-K4 U4-K5 U4-K6 U4-K7 U4-K8 U4-K9 U4-K10 U4-K11 U4-K12 U4-K13 U4-K14 U4-K15 U4-K16 U4-K17 U4-K18 U4-K19 U4-K20 U4-K21 U4-K22 U4-K23 U4-K24 U4-K25 U4-K26 U4-L1 U4-L2 U4-L3 U4-L4 U4-L5 U4-L6 U4-L7 U4-L8 U4-L9 U4-L10 U4-L11 U4-L12 U4-L13 U4-L14 U4-L15 U4-L16 U4-L17 U4-L18 U4-L19 U4-L20 U4-L21 U4-L22 U4-L23 U4-L24 U4-L25 U4-L26 U4-M1 U4-M2 U4-M3 U4-M4 U4-M5 U4-M6 U4-M7 U4-M8 U4-M9 U4-M10 U4-M11 U4-M12 U4-M13 U4-M14 U4-M15 U4-M16 U4-M17 U4-M18 U4-M19 U4-M20 U4-M21 U4-M22 U4-M23 U4-M24 U4-M25 U4-M26 U4-N1 U4-N2 U4-N3 U4-N4 U4-N5 U4-N6 U4-N7 U4-N8 U4-N9 U4-N10 U4-N11 U4-N12 U4-N13 U4-N14 U4-N15 U4-N16 U4-N17 U4-N18 U4-N19 U4-N20 U4-N21 U4-N22 U4-N23 U4-N24 U4-N25 U4-N26 U4-P1 U4-P2 U4-P3 U4-P4 U4-P5 U4-P6 U4-P7 U4-P8 U4-P9 U4-P10 U4-P11 U4-P12 U4-P13 U4-P14 U4-P15 U4-P16 U4-P17 U4-P18 U4-P19 U4-P20 U4-P21 U4-P22 U4-P23 U4-P24 U4-P25 U4-P26 U4-R1 U4-R2 U4-R3 U4-R4 U4-R5 U4-R6 U4-R7 U4-R8 U4-R9 U4-R10 U4-R11 U4-R12 U4-R13 U4-R14 U4-R15 U4-R16 U4-R17 U4-R18 U4-R19 U4-R20 U4-R21 U4-R22 U4-R23 U4-R24 U4-R25 U4-R26 U4-T1 U4-T2 U4-T3 U4-T4 U4-T5 U4-T6 U4-T7 U4-T8 U4-T9 U4-T10 U4-T11 U4-T12 U4-T13 U4-T14 U4-T15 U4-T16 U4-T17 U4-T18 U4-T19 U4-T20 U4-T21 U4-T22 U4-T23 U4-T24 U4-T25 U4-T26 U4-U1 U4-U2 U4-U3 U4-U4 U4-U5 U4-U6 U4-U7 U4-U8 U4-U9 U4-U10 U4-U11 U4-U12 U4-U13 U4-U14 U4-U15 U4-U16 U4-U17 U4-U18 U4-U19 U4-U20 U4-U21 U4-U22 U4-U23 U4-U24 U4-U25 U4-U26 U4-V1 U4-V2 U4-V3 U4-V4 U4-V5 U4-V6 U4-V7 U4-V8 U4-V9 U4-V10 U4-V11 U4-V12 U4-V13 U4-V14 U4-V15 U4-V16 U4-V17 U4-V18 U4-V19 U4-V20 U4-V21 U4-V22 U4-V23 U4-V24 U4-V25 U4-V26 U4-W1 U4-W2 U4-W3 U4-W4 U4-W5 U4-W6 U4-W7 U4-W8 U4-W9 U4-W10 U4-W11 U4-W12 U4-W13 U4-W14 U4-W15 U4-W16 U4-W17 U4-W18 U4-W19 U4-W20 U4-W21 U4-W22 U4-W23 U4-W24 U4-W25 U4-W26 U4-Y1 U4-Y2 U4-Y3 U4-Y4 U4-Y5 U4-Y6 U4-Y7 U4-Y8 U4-Y9 U4-Y10 U4-Y11 U4-Y12 U4-Y13 U4-Y14 U4-Y15 U4-Y16 U4-Y17 U4-Y18 U4-Y19 U4-Y20 U4-Y21 U4-Y22 U4-Y23 U4-Y24 U4-Y25 U4-Y26
pad class EF22X22TOP1: C45-1 C45-2 C46-1 C46-2 C47-1 C47-2 C48-1 C48-2 C49-1 C49-2 C50-1 C50-2 C51-1 C51-2 C52-1 C52-2 C53-1 C53-2 C54-1 C54-2 C55-1 C55-2 C56-1 C56-2 C57-1 C57-2 C69-1 C69-2 C70-1 C70-2 C71-1 C71-2 C72-1 C72-2 C73-1 C73-2 C74-1 C74-2 C81-1 C81-2 C82-1 C82-2 C83-1 C83-2 C84-1 C84-2 C85-1 C85-2 C86-1 C86-2 C93-1 C93-2 C94-1 C94-2 C95-1 C95-2 C96-1 C96-2 C97-1 C97-2 C98-1 C98-2 C105-1 C105-2 C106-1 C106-2 C107-1 C107-2 C108-1 C108-2 C109-1 C109-2 C110-1 C110-2 C117-1 C117-2 C118-1 C118-2 C119-1 C119-2 C120-1 C120-2 C121-1 C121-2 C122-1 C122-2 C123-1 C123-2 C124-1 C124-2 JT1-1 JT1-2 JT1-3 JT2-1 JT2-2 JT2-3 JT3-1 JT3-2 JT3-3 JT4-1 JT4-2 JT4-3 JT5-1 JT5-2 JT5-3 JT6-1 JT6-2 JT6-3 JT7-1 JT7-2 JT7-3 JT8-1 JT8-2 JT8-3 JT9-1 JT9-2 JT9-3 JT10-1 JT10-2 JT10-3 JT11-1 JT11-2 JT11-3 JT12-1 JT12-2 JT12-3 JT13-1 JT13-2 JT13-3 JT14-1 JT14-2 JT14-3 JT15-1 JT15-2 JT15-3 R39-1 R39-2 R40-1 R40-2 R41-1 R41-2 R42-1 R42-2 R96-1 R96-2 R97-1 R97-2 R98-1 R98-2 R99-1 R99-2 R100-1 R100-2 R101-1 R101-2 R102-1 R102-2 R103-1 R103-2 R104-1 R104-2 R105-1 R105-2 R106-1 R106-2 R107-1 R107-2 R109-1 R109-2 R110-1 R110-2 R111-1 R111-2 R112-1 R112-2 R113-1 R113-2 R114-1 R114-2 R115-1 R115-2 R116-1 R116-2 R119-1 R119-2 R122-1 R122-2 R124-1 R124-2 R125-1 R125-2 R127-1 R127-2 R130-1 R130-2 R132-1 R132-2 R158-1 R158-2 R159-1 R159-2 R160-1 R160-2 R161-1 R161-2 R162-1 R162-2 R163-1 R163-2 R164-1 R164-2 R165-1 R165-2 R166-1 R166-2 R167-1 R167-2 R168-1 R168-2 R169-1 R169-2 R170-1 R170-2 R171-1 R171-2 R172-1 R172-2 R173-1 R173-2 R174-1 R174-2 R175-1 R175-2 R176-1 R176-2 R177-1 R177-2 R178-1 R178-2 R179-1 R179-2 R180-1 R180-2 R181-1 R181-2 R182-1 R182-2 R183-1 R183-2 R184-1 R184-2 R185-1 R185-2 R186-1 R186-2 R187-1 R187-2 R188-1 R188-2 R189-1 R189-2 R190-1 R190-2 R191-1 R191-2 R192-1 R192-2 R193-1 R193-2 R194-1 R194-2 R195-1 R195-2 R196-1 R196-2 R197-1 R197-2 R198-1 R198-2 R199-1 R199-2 R200-1 R200-2 R202-1 R202-2 R203-1 R203-2 R205-1 R205-2 R206-1 R206-2 R207-1 R207-2 R208-1 R208-2 R209-1 R209-2 R210-1 R210-2 R211-1 R211-2 R212-1 R212-2 R213-1 R213-2 R214-1 R214-2 R215-1 R215-2 R216-1 R216-2 R217-1 R217-2 R218-1 R218-2 R219-1 R219-2 R220-1 R220-2 R221-1 R221-2 R222-1 R222-2 R223-1 R223-2 R224-1 R224-2 R225-1 R225-2 R226-1 R226-2 R227-1 R227-2 R228-1 R228-2 R229-1 R229-2 R230-1 R230-2 R231-1 R231-2 R232-1 R232-2 R233-1 R233-2 R234-1 R234-2 R235-1 R235-2 R236-1 R236-2 R237-1 R237-2 R238-1 R238-2 R239-1 R239-2 R240-1 R240-2 R242-1 R242-2 R243-1 R243-2 R244-1 R244-2 R245-1 R245-2 R246-1 R246-2 R247-1 R247-2 R248-1 R248-2 R249-1 R249-2 R250-1 R250-2 R251-1 R251-2 R252-1 R252-2 R253-1 R253-2 R254-1 R254-2 R255-1 R255-2 R256-1 R256-2 R257-1 R257-2 R258-1 R258-2 R259-1 R259-2 R260-1 R260-2 R261-1 R261-2 R262-1 R262-2 R263-1 R263-2 R264-1 R264-2 R265-1 R265-2 R266-1 R266-2 R267-1 R267-2 R268-1 R268-2 R269-1 R269-2 R270-1 R270-2 R271-1 R271-2 R272-1 R272-2 R273-1 R273-2 R274-1 R274-2 R275-1 R275-2 R276-1 R276-2 R277-1 R277-2 R278-1 R278-2 R279-1 R279-2 R280-1 R280-2 R281-1 R281-2 R282-1 R282-2 R283-1 R283-2 R284-1 R284-2 R285-1 R285-2 R286-1 R286-2 R292-1 R292-2 R293-1 R293-2 R294-1 R294-2 R295-1 R295-2 R296-1 R296-2 R297-1 R297-2
pad class EF22X57TOP1: U12-2 U12-3 U12-4 U12-5 U12-6
pad class EF22X57TOP2: U12-1
pad class EF24X59TOP1: P6-1 P6-2 P6-3 P6-4 P6-5 P6-6 P6-7 P6-8 P6-9 P6-10 P6-11 P6-12
pad class EF24X87TOP1: U26-1 U26-2 U26-3 U26-4 U26-5
pad class EF25X50TOP1: U6-1 U6-2 U6-3 U6-4 U6-5 U11-1 U11-2 U11-3 U11-4 U11-5 U15-1 U15-2 U15-3 U15-4 U15-5 U16-1 U16-2 U16-3 U16-4 U16-5 U17-1 U17-2 U17-3 U17-4 U17-5
pad class EF28X98TOP1: Q14-1 Q14-2 Q14-3 Q14-4 Q14-5 Q14-6 Q14-7 Q14-8 U3-1 U3-2 U3-3 U3-4 U3-5 U3-6 U3-7 U3-8 U13-1 U13-2 U13-3 U13-4 U13-5 U13-6 U13-7 U13-8
pad class EF31X59TOP1: P6-_1 P6-_2 P6-_3 P6-A4
pad class EF38X32TOP1: C6-2 C7-1 C7-2 C10-1 C10-2 C13-1 C13-2 C14-1 C14-2 C15-1 C15-2 C16-1 C16-2 C17-1 C17-2 C19-1 C19-2 C21-1 C21-2 C30-1 C30-2 C31-1 C31-2 C32-1 C32-2 C34-1 C34-2 C36-1 C36-2 C40-1 C40-2 C41-1 C41-2 C42-1 C42-2 C43-1 C43-2 C44-1 C44-2 C58-1 C58-2 C59-1 C59-2 C64-1 C64-2 C65-1 C65-2 C75-1 C75-2 C76-1 C76-2 C77-1 C77-2 C78-1 C78-2 C79-1 C79-2 C87-1 C87-2 C88-1 C88-2 C90-1 C90-2 C91-1 C91-2 C103-1 C103-2 C111-1 C111-2 C112-1 C112-2 C113-1 C113-2 C114-1 C114-2 C115-1 C115-2 C125-1 C125-2 C126-1 C126-2 C127-1 C127-2 C128-1 C128-2 C129-1 C129-2 C130-1 C130-2 C133-1 C133-2 C134-1 C134-2 C135-1 C135-2 C137-1 C137-2 C138-1 C138-2 C139-1 C139-2 C140-1 C140-2 C141-1 C141-2 C142-1 C142-2 C143-1 C143-2 C144-1 C144-2 C145-1 C145-2 C146-1 C146-2 C147-1 C147-2 C148-1 C148-2 C149-1 C149-2 C150-1 C150-2 C151-1 C151-2 C152-1 C152-2 C153-1 C153-2 C154-1 C154-2 C155-1 C155-2 C156-1 C156-2 C157-1 C157-2 C159-1 C159-2 C160-1 C160-2 C161-1 C161-2 C162-1 C162-2 C163-1 C163-2 C164-1 C164-2 C166-1 C166-2 C167-1 C167-2 C168-1 C168-2 C169-1 C169-2 C170-1 C170-2 C171-1 C171-2 C173-1 C173-2 C174-1 C174-2 C176-1 C176-2 C177-1 C177-2 C178-1 C178-2 C179-1 C179-2 C180-1 C180-2 C182-1 C182-2 C183-1 C183-2 C184-1 C184-2 C185-1 C185-2 C186-1 C186-2 C187-1 C187-2 C188-1 C188-2 C190-1 C190-2 C191-1 C191-2 C192-1 C192-2 C212-1 C212-2 C220-1 C220-2 C223-1 C223-2 C224-1 C224-2 C225-1 C225-2 C226-1 C226-2 C227-1 C227-2 C228-1 C228-2 C229-1 C229-2 C230-1 C230-2 C231-1 C231-2 C232-1 C232-2 C233-1 C233-2 C234-1 C234-2 C235-1 C235-2 C236-1 C236-2 C237-1 C237-2 C238-1 C238-2 C239-1 C239-2 C240-1 C240-2 C241-1 C241-2 C242-1 C242-2 C243-1 C243-2 C244-1 C244-2 C245-1 C245-2 C246-1 C246-2 C247-1 C247-2 C248-1 C248-2 C249-1 C249-2 C250-1 C250-2 C251-1 C251-2 C252-1 C252-2 C253-1 C253-2 Free-1 Free-2 R1-1 R1-2 R2-1 R2-2 R3-1 R3-2 R6-1 R6-2 R8-1 R8-2 R9-1 R9-2 R10-1 R10-2 R11-1 R11-2 R12-1 R12-2 R13-1 R13-2 R14-1 R14-2 R15-1 R15-2 R16-1 R16-2 R17-1 R17-2 R18-1 R18-2 R19-1 R19-2 R20-1 R20-2 R21-1 R21-2 R22-1 R22-2 R23-1 R23-2 R24-1 R24-2 R25-1 R25-2 R26-1 R26-2 R27-1 R27-2 R28-1 R28-2 R29-1 R29-2 R30-1 R30-2 R31-1 R31-2 R32-1 R32-2 R33-1 R33-2 R34-1 R34-2 R35-1 R35-2 R36-1 R36-2 R37-1 R37-2 R38-1 R38-2 R43-1 R43-2 R44-1 R44-2 R45-1 R45-2 R46-1 R46-2 R47-1 R47-2 R48-1 R48-2 R49-1 R49-2 R50-1 R50-2 R51-1 R51-2 R52-1 R52-2 R53-1 R53-2 R54-1 R54-2 R55-1 R55-2 R56-1 R56-2 R57-1 R57-2 R58-1 R58-2 R59-1 R59-2 R60-1 R60-2 R61-1 R61-2 R62-1 R62-2 R63-1 R63-2 R64-1 R64-2 R65-1 R65-2 R66-1 R66-2 R67-1 R67-2 R68-1 R68-2 R69-1 R69-2 R70-1 R70-2 R71-1 R71-2 R72-1 R72-2 R73-1 R73-2 R74-1 R74-2 R75-1 R75-2 R76-1 R76-2 R77-1 R77-2 R78-1 R78-2 R79-1 R79-2 R80-1 R80-2 R81-1 R81-2 R82-1 R82-2 R83-1 R83-2 R84-1 R84-2 R85-1 R85-2 R86-1 R86-2 R87-1 R87-2 R88-1 R88-2 R89-1 R89-2 R90-1 R90-2 R91-1 R91-2 R92-1 R92-2 R93-1 R93-2 R94-1 R94-2 R95-1 R95-2 R108-1 R108-2 R117-1 R117-2 R118-1 R118-2 R120-1 R120-2 R121-1 R121-2 R123-1 R123-2 R126-1 R126-2 R128-1 R128-2 R129-1 R129-2 R131-1 R131-2 R133-1 R133-2 R134-1 R134-2 R135-1 R135-2 R136-1 R136-2 R137-1 R137-2 R138-1 R138-2 R139-1 R139-2 R140-1 R140-2 R141-1 R141-2 R142-1 R142-2 R143-1 R143-2 R144-1 R144-2 R145-1 R145-2 R146-1 R146-2 R147-1 R147-2 R148-1 R148-2 R149-1 R149-2 R150-1 R150-2 R151-1 R151-2 R152-1 R152-2 R153-1 R153-2 R154-1 R154-2 R155-1 R155-2 R157-1 R157-2 R201-1 R201-2 R204-1 R204-2 R241-1 R241-2 R287-1 R287-2 R288-1 R288-2 R289-1 R289-2
pad class EF40X11TOP1: U1-8 U1-9 U1-10 U1-11 U1-12 U1-13 U1-14 U1-22 U1-23 U1-24 U1-25 U1-26 U1-27 U1-28
pad class EF40X40BOT1: F2-1_1 F3-1_1 F4-1_1
pad class EF40X40TOP1: F2-1 F3-1 F4-1
pad class EF40X55TOP1: D1-2 D1-3 D1-4
pad class EF40X56TOP1: Q2-1 Q2-2 Q2-3 Q3-1 Q3-2 Q3-3 Q4-1 Q4-2 Q4-3 Q5-1 Q5-2 Q5-3 Q6-1 Q6-2 Q6-3 Q7-1 Q7-2 Q7-3 Q8-1 Q8-2 Q8-3 Q9-1 Q9-2 Q9-3 Q10-1 Q10-2 Q10-3 Q11-1 Q11-2 Q11-3 Q12-1 Q12-2 Q12-3 Q13-1 Q13-2 Q13-3
pad class EF415X331TOP1: D20-2
pad class EF41X79TOP1: D20-1 D20-3
pad class EF48X55TOP1: D1-1
pad class EF48X88TOP1: Q1-D Q1-G Q1-S U19-1 U19-2 U19-3 U21-1 U21-2 U21-3 U22-1 U22-2 U22-3
pad class EF50X50TOP1: Free-1 Free-2 R4-1 R4-2 R156-1 R156-2 R290-1 R290-2 R291-1 R291-2 S1-1 S1-1_1 S1-2 S1-2_1 S2-1 S2-1_1 S2-2 S2-2_1
pad class EF60X60TOP1: C203-1 C203-2 C207-1 C207-2 D2-1 D2-2 D3-1 D3-2 D5-1 D5-2 D6-1 D6-2 D7-1 D7-2 D8-1 D8-2 D9-1 D9-2 D10-1 D10-2 D11-1 D11-2 D12-1 D12-2 D13-1 D13-2 D14-1 D14-2 D15-1 D15-2 D16-1 D16-2 D17-1 D17-2 D18-1 D18-2 D19-1 D19-2 D21-1 D21-2 D22-1 D22-2 D23-1 D23-2 D24-1 D24-2
pad class EF62X74TOP1: U10-0
pad class EF63X16TOP1: U10-1
pad class EF63X16TOP2: U10-2 U10-3 U10-4 U10-5 U10-6 U10-7 U10-8
pad class EF64X100TOP1: C202-1 C202-2
pad class EF65X90TOP1: L2-1 L2-2
pad class EF79X71TOP1: Y1-1 Y1-2 Y1-3 Y1-4 Y2-1 Y2-2 Y2-3 Y2-4
pad class EF88X104TOP1: C12-N C12-P C29-N C29-P C39-N C39-P C158-1 C158-2 C165-1 C165-2 C175-1 C175-2 C181-1 C181-2 C204-N C204-P C208-N C208-P C209-N C209-P C210-N C210-P C211-N C211-P C213-N C213-P C214-N C214-P C215-N C215-P C216-N C216-P C217-N C217-P C218-N C218-P C221-N C221-P C222-N C222-P
pad class EF90X16TOP1: U2-1
pad class EF90X16TOP2: U2-2 U2-3 U2-4 U2-5 U2-6 U2-7 U2-8 U2-9 U2-10 U2-11 U2-12 U2-13 U2-14 U2-15 U2-16
pad class P:EX100Y100D621: J20-S1 J20-S2
pad class P:EX107Y107D671: Free-2 J4-2 J7-2
pad class P:EX107Y107D701: J6-2 J6-4 J6-5 J6-6
pad class P:EX107Y107D711: J6-3
pad class P:EX126Y126D1261: J20-MH1 J20-MH2
pad class P:EX300Y300D1501: Free-1 J12-1 J14-1
pad class P:EX45Y45D251: Y3-1 Y3-2
pad class P:EX50Y50D301: C205-2
pad class P:EX52Y52D351: J20-1 J20-2 J20-3 J20-4 J20-5 J20-6 J20-7 J20-8 J20-9 J20-10
pad class P:EX55Y55D311: P3-2 P3-3 P3-4 P3-5 P3-6 P3-7 P3-8 P3-9 P3-10 P3-11 P3-12 P3-13 P3-14 P3-15 P3-16 P3-17 P3-18 P3-19 P3-20 P3-21 P3-22 P3-23 P3-24
pad class P:EX57Y57D301: C206-2
pad class P:EX58Y58D361: P4-1 P4-2 P4-3 P4-4 P4-5 P4-6 P4-7 P4-8 P4-9 P4-10 P4-11 P4-12 P4-13 P4-14
pad class P:EX59Y59D351: W1-2
pad class P:EX60Y60D371: TP1-1 TP2-1 TP3-1 TP4-1 TP5-1 TP6-1 TP7-1
pad class P:EX60Y60D401: J20-D1 J20-D2 J20-D3 J20-D4
pad class P:EX62Y62D381: P1-1 P1-2 P1-3 P1-4
pad class P:EX62Y62D421: Free-2 J1-3 J3-3 J9-2 J10-2 J16-2 J18-2 J19-2 P2-2 P2-3 P2-4
pad class P:EX62Y62D422: J15-2 J15-3 J15-4 J15-5
pad class P:EX63Y63D631: J17-53 J17-54
pad class P:EX68Y68D461: CM1-2 CM1-3 CM1-4 CM1-5 CM1-6 CM1-7 CM1-8
pad class P:EX80Y80D551: U18-1 U18-2 U18-3 U18-4 U18-5 U18-6 U18-7 U18-8 U18-9 U18-10
pad class P:EX87Y87D871: J2-0 J13-0
pad class P:SX107Y107D671: Free-1
pad class P:SX107Y107D701: J6-1
pad class P:SX50Y50D301: C205-1 C206-1
pad class P:SX55Y55D311: P3-1
pad class P:SX59Y59D351: W1-1
pad class P:SX62Y62D421: Free-1 J10-1 J16-1 J19-1 P2-1
pad class P:SX62Y62D422: J15-1
pad class P:SX68Y68D461: CM1-1
component class "System Control - Bank0": C47 D9 D12 D16 J2 J3 J4 J6 J7 J11 LD0 LD1 LD2 LD3 LD4 LD5 LD6 LD7 Q5 Q6 Q7 R18 R28 R34 R35 R36 R37 R38 R39 R40 R41 R42 R43 R44 R45 R46 R159 R165 TP1 TP2 TP9 TP10 TP11 TP12 TP13 TP14 TP15 TP16 U11 Y1
component class "System Control - Bank3": R164 R168
component class "System Control - FPGA Supply and Configuration": C35 C36 C43 C45 C46 C49 C50 C53 C54 C55 C56 C59 C60 C63 C102 C104 C105 C106 C107 C108 C109 C110 C112 C113 C115 C116 C117 C118 C119 C120 C121 C122 C123 C124 C125 C126 C127 C129 C130 C131 C132 C133 C134 C135 C136 C137 C138 C139 C140 C141 C142 C143 C145 C146 C147 C148 C149 C150 C151 C152 C153 C154 C155 C156 C157 C158 C159 C160 C161 C163 C164 C165 C167 C168 C169 C170 C171 C172 C173 C174 C175 C178 C179 C180 C181 C182 C183 C185 C186 C187 D6 J14 Q4 R23 R31 R157 R158 R160 R166 R167 R170 R171 R172 R177 R178 R180 R182 R183 S3 U26
component class "System Control - Mode DIP Switch": D13 D14 D15 Q9 Q10 Q11 R47 R48 R49 R50 R152 R153 R155 R174 R175 R176 S2 S4
component class "System Control - Power Supervisors": C31 C34 C42 C44 D5 Q2 Q3 R16 R17 R19 R20 R22 R24 R25 R29 S1 U7 U9 U10
component class "System Control - SDRAM": C57 C58 C61 C62 C64 C65 C66 C67 C68 C69 C76 C77 C78 C85 C86 C87 C88 C205 C208 C209 C210 C211 C212 C213 C214 C215 C216 C225 C226 C227 C228 C229 C230 C231 C232 C233 C234 C235 C236 C237 C238 C240 C241 C242 C243 C244 C245 C246 C247 C251 R51 R52 R53 R54 R55 R56 R57 R58 R59 R60 R61 R62 R63 R64 R65 R66 R67 R68 R69 R70 R71 R72 R76 R77 R78 R79 R80 R81 R82 R83 R84 R85 R86 R87 R88 R89 R90 R91 R92 R93 R94 R95 R96 R97 R102 R103 R104 R105 R106 R107 R108 R109 R110 R111 R112 R113 R114 R115 R117 R118 R119 R120 R121 R122 R123 R192 R193 R194 R195 R196 R197 R198 R199 R200 R201 R202 R203 R204 R205 R206 R207 R208 R209 R210 R211 R212 R213 R221 R222 R223 R224 R225 R226 R227 R228 R229 R230 R231 R232 R233 R234 R235 R236 R237 R238 R239 R240 R241 R242 R260 R261 R262 R263 R264 R265 R266 R267 R268 R269 R273 R274 R275 R276 R277 R278 R279 R280 R281 R282 R284 R285 R286 R287 R289 R290 U21 U22
component class "System Control - Power": C1 C2 C3 C4 C7 C8 C9 C11 C12 C15 C17 C21 C22 C23 C25 C37 C38 D1 D2 D3 D4 D8 F1 F2 F3 F4 L1 L2 MT1 MT2 MT3 MT4 Q1 R1 R2 R3 R4 R6 R33 TP3 TP4 TP5 TP6 TP7 TP8 U1 U3 U5 U8
component class "System Control - Bank1": DISP1 J5 J10 J12 J13 R5 R7 R73 R74 R75 R98 R99 R100 R101 R116 U13 W3 W4

## Components (designator, comment, footprint, x,y, rotation, side; value= is the part's Value field where it differs from the comment)
C1 "10uF 25V" SM/CT_6032 987.74,4733.46 r180 top
C2 "10uF 25V" SM/CT_6032 794.83,4075.98 r0 top
C3 "10uF 25V" SM/CT_6032 991.68,4253.15 r180 top